# Allegro board xm655_board_file.brd
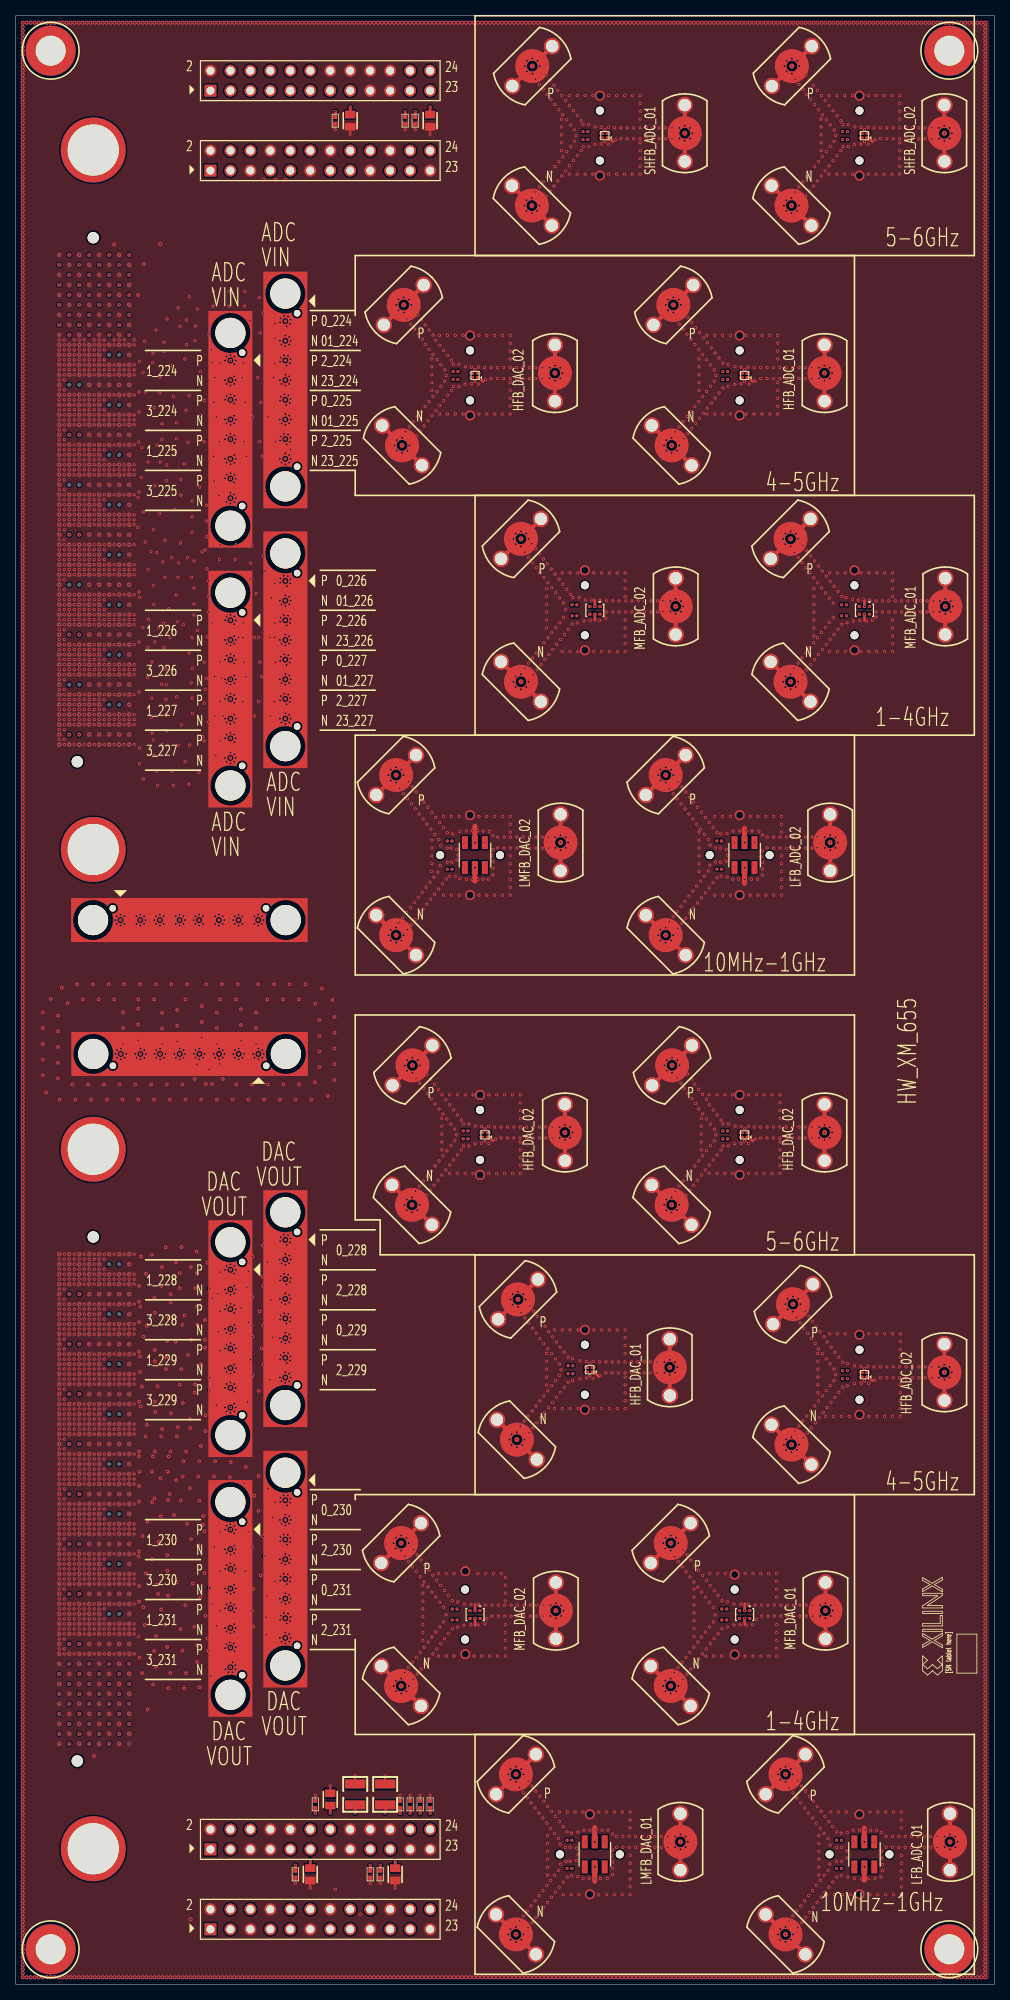
[diagram p0: board, top side]
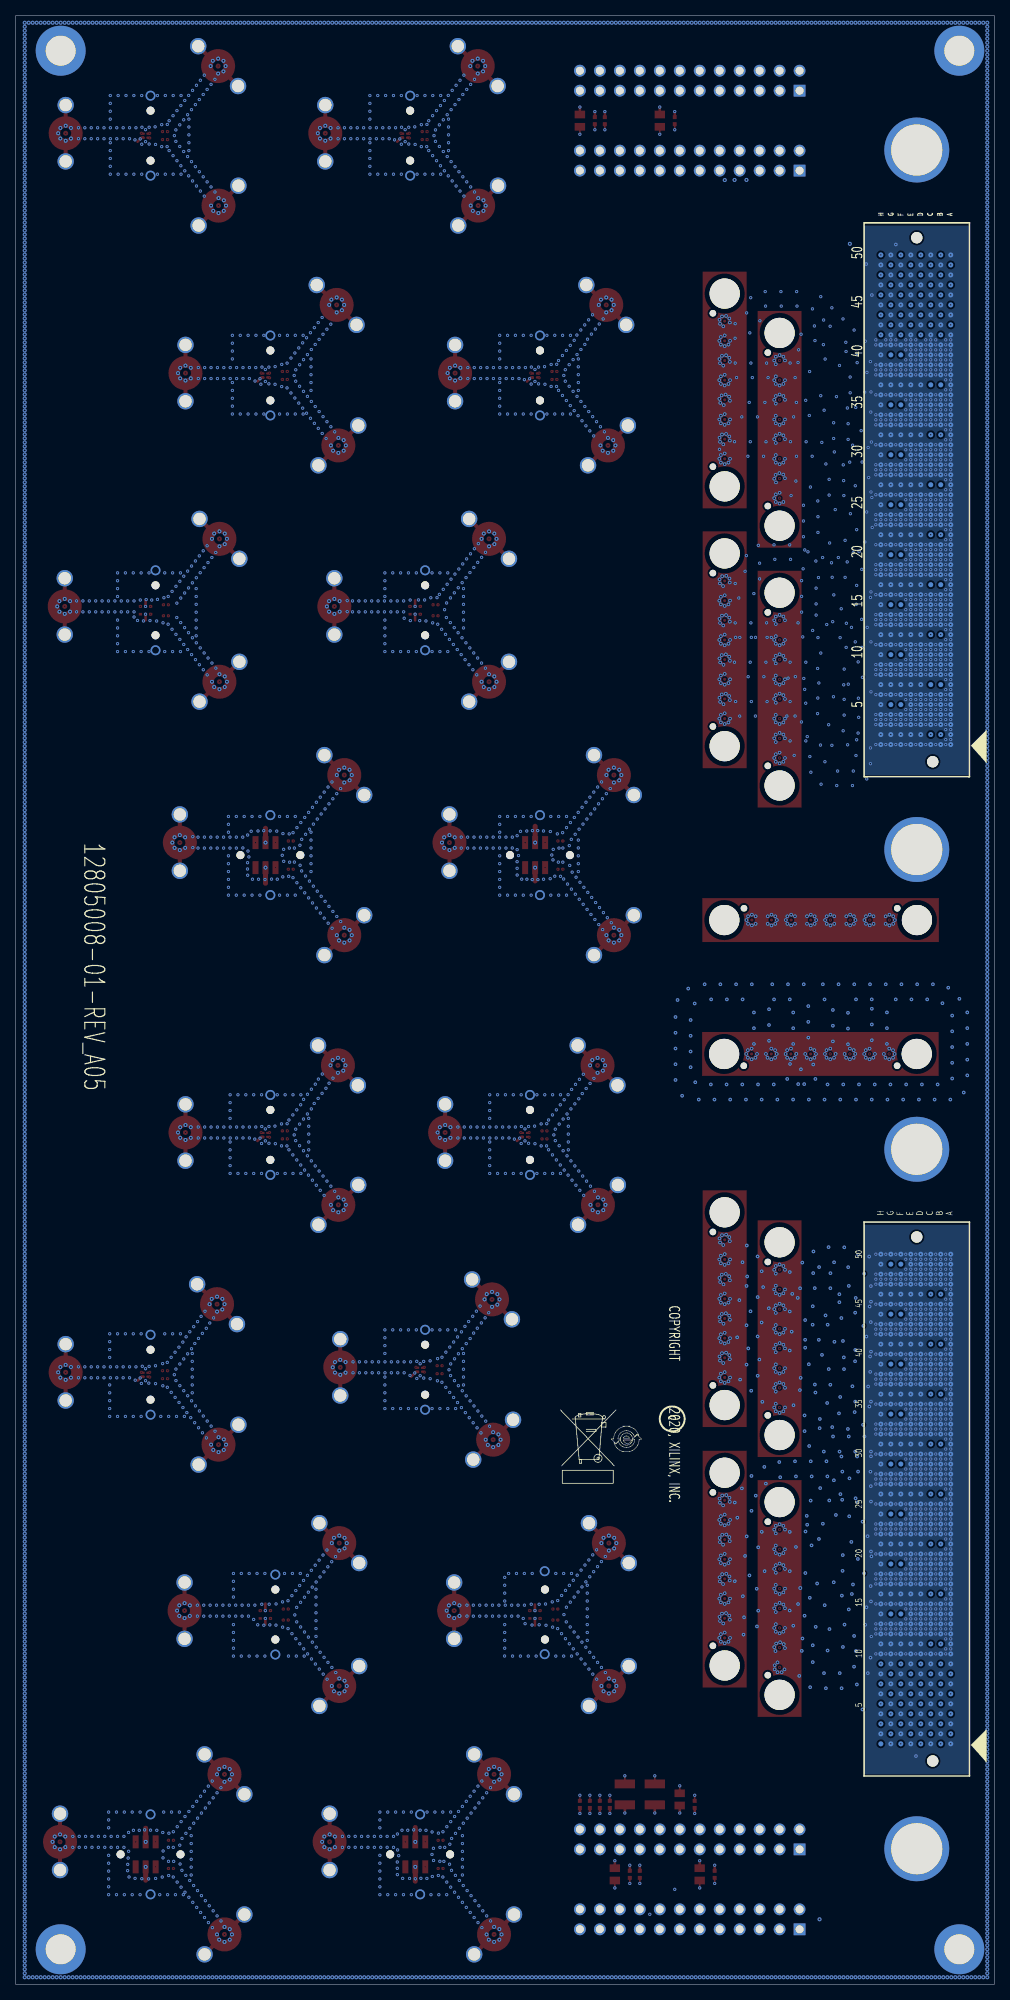
[diagram p1: board, bottom side, seen from below]

Outline 124.46 x 250.19 mm; copper layers: TOP, L02_RF_SIG, L03_GND, L04_RF_SIG, L05_GND, L06_PWR, L07_GND, L08_SIG, L09_GND, BOTTOM. Coordinates in mm from the lower left corner of the outline.
Outline path: 0,250.19 0,0 124.46,0 124.46,250.19 0,250.19

## Design rules (mm)
constraint set DEFAULT: min track width 0.318
net group EAST_TC_LAYER2_6INCH_: nets EAST_TC_LAYER2_6INCH_N EAST_TC_LAYER2_6INCH_P
net group EAST_TC_LAYER4_6INCH_: nets EAST_TC_LAYER4_6INCH_N EAST_TC_LAYER4_6INCH_P
net group HFB_ADC_01: nets HFB_ADC_01_N HFB_ADC_01_P
net group HFB_DAC_02: nets HFB_ADC_02_N HFB_ADC_02_P
net group HFB_DAC_02_P: nets HFB_DAC_02_P N22561101
net group LFB_ADC_01: nets LFB_ADC_01_N LFB_ADC_01_P
net group LFB_ADC_02: nets LFB_ADC_02_N LFB_ADC_02_P
net group LFB_DAC_01_P: nets LFB_DAC_01_P N22112826
net group LFB_DAC_02_N: nets LFB_DAC_02_N N22565166
net group LFB_DAC_02_P: nets LFB_DAC_02_P N22565110
net group MFB_ADC_01_P: nets MFB_ADC_01_P N21418030
net group MFB_ADC_02_N: nets MFB_ADC_02_N N21418070
net group MFB_ADC_02_P: nets MFB_ADC_02_P N21418063
net group MFB_DAC_01: nets MFB_DAC_01_N MFB_DAC_01_P
net group MFB_DAC_02: nets MFB_DAC_02_N MFB_DAC_02_P
net group TC_LAYER2_6INCH_: nets WEST_TC_LAYER2_6INCH_N WEST_TC_LAYER2_6INCH_P
net group TC_LAYER4_6INCH_: nets WEST_TC_LAYER4_6INCH_N WEST_TC_LAYER4_6INCH_P
net group ADC: nets ADC224_T0_CH0_P ADC224_T0_CH1_P ADC224_T0_CH2_P ADC224_T0_CH3_P ADC225_T1_CH0_P ADC225_T1_CH1_P ADC225_T1_CH2_P ADC225_T1_CH3_P ADC226_T2_CH0_P ADC226_T2_CH1_P ADC226_T2_CH2_P ADC226_T2_CH3_P ADC227_T3_CH0_P ADC227_T3_CH1_P ADC227_T3_CH2_P ADC227_T3_CH3_P
net group ADC_DATA: nets ADC224_T0_CH0_N ADC224_T0_CH1_N ADC224_T0_CH2_N ADC224_T0_CH3_N ADC225_T1_CH0_N ADC225_T1_CH1_N ADC225_T1_CH2_N ADC225_T1_CH3_N ADC226_T2_CH0_N ADC226_T2_CH1_N ADC226_T2_CH2_N ADC226_T2_CH3_N ADC227_T3_CH0_N ADC227_T3_CH1_N ADC227_T3_CH2_N ADC227_T3_CH3_N
net group ADC_DIG: nets ADCIO_00 ADCIO_01 ADCIO_02 ADCIO_03 ADCIO_04 ADCIO_05 ADCIO_06 ADCIO_07 ADCIO_08 ADCIO_09 ADCIO_10 ADCIO_11 ADCIO_12 ADCIO_13 ADCIO_14 ADCIO_15 ADCIO_16 ADCIO_17 ADCIO_18 ADCIO_19
net group DAC: nets DAC228_T0_CH0_P DAC228_T0_CH1_P DAC228_T0_CH2_P DAC228_T0_CH3_P DAC229_T1_CH0_P DAC229_T1_CH1_P DAC229_T1_CH2_P DAC229_T1_CH3_P DAC230_T2_CH0_P DAC230_T2_CH1_P DAC230_T2_CH2_P DAC230_T2_CH3_P DAC231_T3_CH0_P DAC231_T3_CH1_P DAC231_T3_CH2_P DAC231_T3_CH3_P
net group DAC_DATA: nets DAC228_T0_CH0_N DAC228_T0_CH1_N DAC228_T0_CH2_N DAC228_T0_CH3_N DAC229_T1_CH0_N DAC229_T1_CH1_N DAC229_T1_CH2_N DAC229_T1_CH3_N DAC230_T2_CH0_N DAC230_T2_CH1_N DAC230_T2_CH2_N DAC230_T2_CH3_N DAC231_T3_CH0_N DAC231_T3_CH1_N DAC231_T3_CH2_N DAC231_T3_CH3_N
net group DAC_DIG: nets DACIO_00 DACIO_01 DACIO_02 DACIO_03 DACIO_04 DACIO_05 DACIO_06 DACIO_07 DACIO_08 DACIO_09 DACIO_10 DACIO_11 DACIO_12 DACIO_13 DACIO_14 DACIO_15 DACIO_16 DACIO_17 DACIO_18 DACIO_19
net group HFB_ADC_02: nets HFB_DAC_02_N
net group LFB_DAC_01: nets LFB_DAC_01_N
net group MFB_ADC_01: nets MFB_ADC_01_N

## Placement (name value [footprint] x y rotation side)
C1  0.1UF  [CAPC60X30X40]  105.36 175.32 180 top
C2  0.1UF  [CAPC60X30X40]  90.23 204.98 180 top
C3  0.1UF  [CAPC60X30X40]  105.36 173.93 180 top
C4  0.1UF  [CAPC60X30X40]  90.23 203.96 180 top
C5  0.1UF  [CAPC60X30X40]  71.07 175.32 180 top
C6  0.1UF  [CAPC60X30X40]  105.47 77.98 180 top
C7  0.1UF  [CAPC60X30X40]  71.07 173.93 180 top
C8  0.1UF  [CAPC60X30X40]  105.47 76.96 180 top
C9  0.1UF  [CAPC60X30X40]  104.72 14.72 180 top
C10  0.1UF  [CAPC60X30X40]  104.72 18.3 180 top
C11  0.1UF  [CAPC60X30X40]  89.48 141.72 180 top
C12  0.1UF  [CAPC60X30X40]  89.48 145.3 180 top
C13  0.1UF  [CAPC60X30X40]  90.12 47.69 180 top
C14  0.1UF  [CAPC60X30X40]  70.55 78.61 180 top
C15  0.1UF  [CAPC60X30X40]  90.12 46.29 180 top
C16  0.1UF  [CAPC60X30X40]  70.55 77.6 180 top
C17  0.1UF  [CAPC60X30X40]  55.83 47.69 180 top
C18  0.1UF  [CAPC60X30X40]  55.94 204.98 180 top
C19  0.1UF  [CAPC60X30X40]  55.83 46.29 180 top
C20  0.1UF  [CAPC60X30X40]  55.94 203.96 180 top
C21  0.1UF  [CAPC60X30X40]  70.43 14.72 180 top
C22  0.1UF  [CAPC60X30X40]  70.43 18.3 180 top
C23  0.1UF  [CAPC60X30X40]  55.19 141.72 180 top
C24  0.1UF  [CAPC60X30X40]  55.19 145.3 180 top
C25  10UF  [CAPC320X250X220]  43.18 24.13 90 top
C26  1UF  [CAPC100X50X60]  51.44 22.86 90 top
C27  1UF  [CAPC100X50X60]  50.16 22.86 90 top
C29  10UF  [CAPC200X125X155]  52.7 236.85 270 top
C30  1UF  [CAPC100X50X60]  50.8 236.85 270 top
C31  1UF  [CAPC100X50X60]  49.53 236.85 270 top
C32  10UF  [CAPC200X125X155]  42.55 236.85 270 top
C33  1UF  [CAPC100X50X60]  40.64 236.85 270 top
C34  10UF  [CAPC200X125X155]  37.47 13.97 270 top
C35  1UF  [CAPC100X50X60]  35.56 13.97 270 top
C36  10UF  [CAPC320X250X220]  46.99 24.13 90 top
C37  1UF  [CAPC100X50X60]  52.7 22.86 90 top
C38  1UF  [CAPC100X50X60]  48.9 22.86 90 top
C39  10UF  [CAPC200X125X155]  48.26 13.97 270 top
C40  1UF  [CAPC100X50X60]  46.35 13.97 270 top
C41  1UF  [CAPC100X50X60]  45.09 13.97 270 top
C42  10UF  [CAPC200X125X155]  40.01 23.5 90 top
C43  1UF  [CAPC100X50X60]  38.1 22.86 90 top
C44  0.1UF  [CAPC60X30X40]  72.45 235.46 180 top
C45  0.1UF  [CAPC60X30X40]  72.45 234.44 180 top
C46  0.1UF  [CAPC60X30X40]  105.47 235.46 180 top
C47  0.1UF  [CAPC60X30X40]  105.47 234.44 180 top
C48  0.1UF  [CAPC60X30X40]  90.23 108.46 180 top
C49  0.1UF  [CAPC60X30X40]  90.23 107.44 180 top
C50  0.1UF  [CAPC60X30X40]  57.21 108.46 180 top
C51  0.1UF  [CAPC60X30X40]  57.21 107.44 180 top
J1  CON_SMA_SCREW_ON  [SMA_3P_MOLEX_732513481]  98.55 183.71 135 top
J2  CON_SMA_SCREW_ON  [SMA_3P_MOLEX_732513481]  83.64 213.44 135 top
J3  CON_SMA_SCREW_ON  [SMA_3P_MOLEX_732513481]  118.23 175.12 0 top
J4  CON_SMA_SCREW_ON  [SMA_3P_MOLEX_732513481]  102.87 204.77 0 top
J5  CON_SMA_SCREW_ON  [SMA_3P_MOLEX_732513481]  98.55 165.54 45 top
J6  CON_SMA_SCREW_ON  [SMA_3P_MOLEX_732513481]  83.43 195.58 45 top
J7  CON_SMA_SCREW_ON  [SMA_3P_MOLEX_732513481]  83.94 175.12 0 top
J8  CON_SMA_SCREW_ON  [SMA_3P_MOLEX_732513481]  64.26 183.71 135 top
J9  CON_SMA_SCREW_ON  [SMA_3P_MOLEX_732513481]  118.11 77.77 0 top
J10  CON_SMA_SCREW_ON  [SMA_3P_MOLEX_732513481]  98.86 86.44 135 top
J11  CON_SMA_SCREW_ON  [SMA_3P_MOLEX_732513481]  64.26 165.54 45 top
J12  CON_SMA_SCREW_ON  [SMA_3P_MOLEX_732513481]  98.67 68.58 45 top
J13  CON_SMA_SCREW_ON  [SMA_3P_MOLEX_732513481]  118.83 18.1 0 top
J14  CON_SMA_SCREW_ON  [SMA_3P_MOLEX_732513481]  97.91 6.33 45 top
J15  CON_SMA_SCREW_ON  [SMA_3P_MOLEX_732513481]  97.91 26.69 135 top
J16  CON_SMA_SCREW_ON  [SMA_3P_MOLEX_732513481]  82.67 133.33 45 top
J17  CON_SMA_SCREW_ON  [SMA_3P_MOLEX_732513481]  103.59 145.1 0 top
J18  CON_SMA_SCREW_ON  [SMA_3P_MOLEX_732513481]  82.67 153.69 135 top
J21  -  [HDR_2X12]  24.77 230.5 0 top
J23  -  [HDR_2X12]  24.77 240.66 0 top
J25  CON_SMA_SCREW_ON  [SMA_3P_MOLEX_732513481]  102.99 47.48 0 top
J26  CON_SMA_SCREW_ON  [SMA_3P_MOLEX_732513481]  83.31 56.07 135 top
J27  CON_SMA_SCREW_ON  [SMA_3P_MOLEX_732513481]  83.19 78.41 0 top
J28  CON_SMA_SCREW_ON  [SMA_3P_MOLEX_732513481]  63.88 87.05 135 top
J29  CON_SMA_SCREW_ON  [SMA_3P_MOLEX_732513481]  83.31 37.91 45 top
J30  CON_SMA_SCREW_ON  [SMA_3P_MOLEX_732513481]  63.74 69.22 45 top
J31  CON_SMA_SCREW_ON  [SMA_3P_MOLEX_732513481]  49.02 56.07 135 top
J32  CON_SMA_SCREW_ON  [SMA_3P_MOLEX_732513481]  49.35 213.44 135 top
J33  CON_SMA_SCREW_ON  [SMA_3P_MOLEX_732513481]  68.7 47.48 0 top
J34  CON_SMA_SCREW_ON  [SMA_3P_MOLEX_732513481]  68.58 204.77 0 top
J35  CON_SMA_SCREW_ON  [SMA_3P_MOLEX_732513481]  49.02 37.91 45 top
J36  CON_SMA_SCREW_ON  [SMA_3P_MOLEX_732513481]  49.14 195.58 45 top
J37  CON_SMA_SCREW_ON  [SMA_3P_MOLEX_732513481]  63.62 6.33 45 top
J38  CON_SMA_SCREW_ON  [SMA_3P_MOLEX_732513481]  84.54 18.1 0 top
J39  CON_SMA_SCREW_ON  [SMA_3P_MOLEX_732513481]  63.62 26.69 135 top
J40  CON_SMA_SCREW_ON  [SMA_3P_MOLEX_732513481]  69.3 145.1 0 top
J41  CON_SMA_SCREW_ON  [SMA_3P_MOLEX_732513481]  48.38 133.33 45 top
J42  CON_SMA_SCREW_ON  [SMA_3P_MOLEX_732513481]  48.38 153.69 135 top
J44  -  [HDR_2X12]  24.77 6.99 0 top
J48  -  [HDR_2X12]  24.77 17.14 0 top
J49  -  [SAMTEC_LPAM_50_030_L_08_2_K_TR]  9.86 188.67 90 bottom
J50  -  [JSO_0415_01_PRESS_FIT]  9.86 144.22 0 top
J51  -  [JSO_0415_01_PRESS_FIT]  9.86 233.12 0 top
J52  -  [JSO_0415_01_PRESS_FIT]  9.86 17.22 0 top
J53  -  [JSO_0415_01_PRESS_FIT]  9.86 106.12 0 top
J55  -  [SAMTEC_LPAM_50_030_L_08_2_K_TR]  9.86 61.67 90 bottom
J56  COREHC2_8CH  [CON_CARLISE_COREH2C_8P]  30.86 118.24 180 top
J57  COREHC2_8CH  [CON_CARLISE_COREH2C_8P]  13.34 135.25 0 top
J58  CON_SMA_SCREW_ON  [SMA_3P_MOLEX_732513481]  65.7 243.79 135 top
J59  CON_SMA_SCREW_ON  [SMA_3P_MOLEX_732513481]  85.09 235.25 0 top
J60  CON_SMA_SCREW_ON  [SMA_3P_MOLEX_732513481]  65.65 226.06 45 top
J61  CON_SMA_SCREW_ON  [SMA_3P_MOLEX_732513481]  98.72 243.79 135 top
J62  CON_SMA_SCREW_ON  [SMA_3P_MOLEX_732513481]  118.11 235.25 0 top
J63  CON_SMA_SCREW_ON  [SMA_3P_MOLEX_732513481]  98.67 226.06 45 top
J64  CON_SMA_SCREW_ON  [SMA_3P_MOLEX_732513481]  83.48 116.79 135 top
J65  CON_SMA_SCREW_ON  [SMA_3P_MOLEX_732513481]  102.87 108.25 0 top
J66  CON_SMA_SCREW_ON  [SMA_3P_MOLEX_732513481]  83.43 99.06 45 top
J67  CON_SMA_SCREW_ON  [SMA_3P_MOLEX_732513481]  50.46 116.79 135 top
J68  CON_SMA_SCREW_ON  [SMA_3P_MOLEX_732513481]  69.85 108.25 0 top
J69  CON_SMA_SCREW_ON  [SMA_3P_MOLEX_732513481]  50.41 99.06 45 top
JHC1  COREHC2_8CH  [CON_CARLISE_COREH2C_8P]  34.29 94.61 270 top
JHC2  COREHC2_8CH  [CON_CARLISE_COREH2C_8P]  27.3 90.81 270 top
JHC3  COREHC2_8CH  [CON_CARLISE_COREH2C_8P]  34.29 61.52 270 top
JHC4  COREHC2_8CH  [CON_CARLISE_COREH2C_8P]  27.3 57.78 270 top
JHC5  COREHC2_8CH  [CON_CARLISE_COREH2C_8P]  34.29 211.38 270 top
JHC6  COREHC2_8CH  [CON_CARLISE_COREH2C_8P]  27.3 206.38 270 top
JHC7  COREHC2_8CH  [CON_CARLISE_COREH2C_8P]  34.29 178.36 270 top
JHC8  COREHC2_8CH  [CON_CARLISE_COREH2C_8P]  27.3 173.35 270 top
MH1  MH_150_250  [MH_250H150]  4.45 245.75 0 top
MH2  MH_150_250  [MH_250H150]  118.75 245.75 0 top
MH3  MH_150_250  [MH_250H150]  118.75 4.45 0 top
MH4  MH_150_250  [MH_250H150]  4.45 4.45 0 top
NOREF  -  [unnamed]  107.31 231.78 0 top
NOREF#2  -  [unnamed]  92.08 207.65 0 top
NOREF#3  -  [#2]  -2.03 433.7 0 top
NOREF#4  -  [#2]  195.03 469.76 0 top
NOREF#5  -  [unnamed]  91.44 50.16 0 top
NOREF#6  -  [unnamed]  69.22 16.51 0 top
NOREF#7  -  [unnamed]  72.39 177.8 0 top
NOREF#8  -  [#2]  -1.93 17.14 0 top
NOREF#9  -  [unnamed]  59.05 104.78 0 top
NOREF#10  -  [#2]  21.1 253.37 0 top
NOREF#11  -  [#2]  13.93 413.64 0 top
NOREF#12  -  [#2]  124.46 0 90 top
NOREF#13  -  [unnamed]  74.3 238.12 0 top
NOREF#14  -  [unnamed]  106.68 177.8 0 top
NOREF#15  -  [unnamed]  72.39 171.45 0 top
NOREF#16  -  [unnamed]  76.83 16.51 0 top
NOREF#17  -  [#2]  23.5 149.22 0 top
NOREF#18  -  [#2]  24.23 100.97 0 top
NOREF#19  -  [unnamed]  107.31 74.3 0 top
NOREF#20  -  [unnamed]  111.12 16.51 0 top
NOREF#21  -  [unnamed]  103.5 16.51 0 top
NOREF#22  -  [unnamed]  57.78 207.65 0 top
NOREF#23  -  [unnamed]  59.05 111.12 0 top
NOREF#24  -  [unnamed]  57.78 201.29 0 top
NOREF#25  -  [unnamed]  92.08 104.78 0 top
NOREF#26  -  [unnamed]  95.89 143.51 0 top
NOREF#27  -  [unnamed]  88.27 143.51 0 top
NOREF#28  -  [unnamed]  91.44 43.81 0 top
NOREF#29  -  [unnamed]  72.39 74.93 0 top
NOREF#30  -  [#2]  5.39 181.74 0 top
NOREF#31  -  [unnamed]  53.98 143.51 0 top
NOREF#32  -  [unnamed]  74.3 231.78 0 top
NOREF#33  -  [unnamed]  92.08 201.29 0 top
NOREF#34  -  [unnamed]  57.15 43.81 0 top
NOREF#35  -  [unnamed]  57.15 50.16 0 top
NOREF#36  -  [unnamed]  92.08 111.12 0 top
NOREF#37  -  [#2]  0 250.19 0 top
NOREF#38  -  [#2]  5.71 126.66 0 top
NOREF#39  -  [unnamed]  61.59 143.51 0 top
NOREF#40  -  [unnamed]  107.31 238.12 0 top
NOREF#41  -  [#2]  195.25 -18.37 0 top
NOREF#42  -  [unnamed]  106.68 171.45 0 top
NOREF#43  -  [#2]  -2.03 -9.25 0 top
NOREF#44  -  [unnamed]  107.31 80.64 0 top
NOREF#45  -  [#2]  -2.03 464.02 0 top
NOREF#46  -  [unnamed]  72.39 81.28 0 top
NOREF#47  -  [#2]  655.72 288.7 0 top
U1  BD1631J50100AHF  [BALUN_0805]  107.95 174.62 270 top
U2  -  [BD3150N50100AHF]  92.71 204.47 270 top
U3  BD1631J50100AHF  [BALUN_0805]  73.66 174.62 270 top
U4  -  [BD3150N50100AHF]  107.95 77.47 270 top
U5  TCM2-33WX+  [TRANS_DB1627]  107.95 16.51 180 top
U6  TCM2-33WX+  [TRANS_DB1627]  92.71 143.51 180 top
U7  BD1631J50100AHF  [BALUN_0805]  92.71 46.99 270 top
U8  -  [BD3150N50100AHF]  73.03 78.11 270 top
U9  BD1631J50100AHF  [BALUN_0805]  58.42 46.99 270 top
U10  -  [BD3150N50100AHF]  58.42 204.47 270 top
U11  TCM2-33WX+  [TRANS_DB1627]  73.66 16.51 180 top
U12  TCM2-33WX+  [TRANS_DB1627]  58.42 143.51 180 top
U13  BD4859N50100AHF  [BD3150N50100AHF]  74.93 234.95 270 top
U14  BD4859N50100AHF  [BD3150N50100AHF]  107.95 234.95 270 top
U15  BD4859N50100AHF  [BD3150N50100AHF]  92.71 107.95 270 top
U16  BD4859N50100AHF  [BD3150N50100AHF]  59.69 107.95 270 top

## Library data of the parts
C1 C21 C23 C24 = CAP_NP: alternate symbols: (CAPC60X30X40RND); signal model: DEFAULT_CAPACITOR_100000pF_2_1
C2-C4 C8-C20 C22 C44-C51 = CAP_NP: alternate symbols: (CAPC60X30X40RND)
C5 = CAP_NP: alternate symbols: (CAPC60X30X40RND); signal model: DEFAULT_CAPACITOR_2.2e+07pF_2_1
C6 = CAP_NP: alternate symbols: (CAPC60X30X40RND); signal model: DEFAULT_CAPACITOR_1e+08pF_2_1
C7 = CAP_NP: alternate symbols: (CAPC60X30X40RND); signal model: DEFAULT_CAPACITOR_1e+07pF_2_1
C25 = CAP_NP: alternate symbols: (CAPC320X250X220RND); signal model: CAP_NP_CAPC60X30X40_0.1UF_CAPC60X30X40RND_0.1UF
C26 C27 C31 C37 C40 = CAP_NP: alternate symbols: (CAPC100X50X60RND); signal model: DEFAULT_CAPACITOR_100000pF_2_1
C29 C32 C34 C39 = CAP_NP: alternate symbols: (CAPC200X125X155RND)
C30 C33 C35 C38 = CAP_NP: alternate symbols: (CAPC100X50X60RND)
C36 = CAP_NP: alternate symbols: (CAPC320X250X220RND)
C41 = CAP_NP: alternate symbols: (CAPC100X50X60RND); signal model: DEFAULT_CAPACITOR_1e+06pF_2_1
C42 = CAP_NP: alternate symbols: (CAPC200X125X155RND); signal model: DEFAULT_CAPACITOR_100000pF_2_1
C43 = CAP_NP: alternate symbols: (CAPC100X50X60RND); signal model: DEFAULT_CAPACITOR_1000pF_2_1
J1-J18 J25-J42 J58-J69 = SMA-SCREW-ON: alternate symbols: (32K10K_400_3M_73251_DUAL)
J21 J23 J44 J48 = HDR_2X12
J49 J55 = LPAM-50-01.0-L-08-2-K-TR
J50-J53 = HOLE_JSO
J56 J57 JHC1-JHC8 = COREHC2_8CH
MH1-MH4 = HOLE
U1 U3 U7 U9 = BD1631J50100AHF
U2 U4 U8 U10 = BD3150N50100AHF
U5 U6 U11 U12 = TCM2-33WX+
U13-U16 = BD4859N50100AHF

## Footprints (pads in the part's own frame, mm; a bottom-side part is the same pattern mirrored in y, then rotated)
BALUN_0805
  rect 0.33x0.406 smd: 1(-0.495,0.65) 2(-0.495,0) 3(-0.495,-0.65) 4(0.495,-0.65) 5(0.495,0) 6(0.495,0.65)
BD3150N50100AHF
  rect 0.3x0.3 smd: 1(0.28,0.28)
  rect 0.25x0.25 smd: 2(-0.25,0.25) 3(-0.25,-0.25) 4(0.25,-0.25)
CAPC60X30X40
  rect 0.275x0.33 smd: 1(-0.263,0) 2(0.263,0)
CAPC100X50X60
  rect 0.5x0.51 smd: 1(-0.45,0) 2(0.45,0)
CAPC200X125X155
  rect 0.98x1.32 smd: 1(-0.78,0) 2(0.78,0)
CAPC320X250X220
  rect 1.145x2.59 smd: 1(-1.333,0) 2(1.333,0)
CON_CARLISE_COREH2C_8P
  round 3.835 hole 3.835 unplated: (-3.5,0) (21,0)
  round 0.838 hole 0.838 unplated: (-1,1.5) (18.5,1.5)
  round 0.406 smd: 1(0,0) 2(2.5,0) 3(5,0) 4(7.5,0) 5(10,0) 6(12.5,0) 7(15,0) 8(17.5,0)
  round 0.1 smd: 9(1.25,1.25) 10(16.25,1.25)
HDR_2X12
  rect 1.5x1.5 hole 1.016: 1(0,0)
  round 1.5 hole 1.016: 2(0,2.54) 3(2.54,0) 4(2.54,2.54) 5(5.08,0) 6(5.08,2.54) 7(7.62,0) 8(7.62,2.54) 9(10.16,0) 10(10.16,2.54) 11(12.7,0) 12(12.7,2.54) 13(15.24,0) 14(15.24,2.54) 15(17.78,0) 16(17.78,2.54) 17(20.32,0) 18(20.32,2.54) 19(22.86,0) 20(22.86,2.54) 21(25.4,0) 22(25.4,2.54) 23(27.94,0) 24(27.94,2.54)
JSO_0415_01_PRESS_FIT
  round 8.255 hole 6.502 unplated: (0,0)
MH_250H150
  round 6.35 hole 3.81: 1(0,0)
SAMTEC_LPAM_50_030_L_08_2_K_TR
  round 1.44 hole 1.448 unplated: (-33.295,-2.03) (33.305,0)
  round 0.64 smd: A1(-31.115,-4.32) A2(-29.845,-4.32) A3(-28.575,-4.32) A4(-27.305,-4.32) A5(-26.035,-4.32) A6(-24.765,-4.32) A7(-23.495,-4.32) A8(-22.225,-4.32) A9(-20.955,-4.32) A10(-19.685,-4.32) A11(-18.415,-4.32) A12(-17.145,-4.32) A13(-15.875,-4.32) A14(-14.605,-4.32) A15(-13.335,-4.32) A16(-12.065,-4.32) A17(-10.795,-4.32) A18(-9.525,-4.32) A19(-8.255,-4.32) A20(-6.985,-4.32) A21(-5.715,-4.32) A22(-4.445,-4.32) A23(-3.175,-4.32) A24(-1.905,-4.32) A25(-0.635,-4.32) A26(0.635,-4.32) A27(1.905,-4.32) A28(3.175,-4.32) A29(4.445,-4.32) A30(5.715,-4.32) A31(6.985,-4.32) A32(8.255,-4.32) A33(9.525,-4.32) A34(10.795,-4.32) A35(12.065,-4.32) A36(13.335,-4.32) A37(14.605,-4.32) A38(15.875,-4.32) A39(17.145,-4.32) A40(18.415,-4.32) A41(19.685,-4.32) A42(20.955,-4.32) A43(22.225,-4.32) A44(23.495,-4.32) A45(24.765,-4.32) A46(26.035,-4.32) A47(27.305,-4.32) A48(28.575,-4.32) A49(29.845,-4.32) A50(31.115,-4.32) B1(-31.115,-3.05) B2(-29.845,-3.05) B3(-28.575,-3.05) B4(-27.305,-3.05) B5(-26.035,-3.05) B6(-24.765,-3.05) B7(-23.495,-3.05) B8(-22.225,-3.05) B9(-20.955,-3.05) B10(-19.685,-3.05) B11(-18.415,-3.05) B12(-17.145,-3.05) B13(-15.875,-3.05) B14(-14.605,-3.05) B15(-13.335,-3.05) B16(-12.065,-3.05) B17(-10.795,-3.05) B18(-9.525,-3.05) B19(-8.255,-3.05) B20(-6.985,-3.05) B21(-5.715,-3.05) B22(-4.445,-3.05) B23(-3.175,-3.05) B24(-1.905,-3.05) B25(-0.635,-3.05) B26(0.635,-3.05) B27(1.905,-3.05) B28(3.175,-3.05) B29(4.445,-3.05) B30(5.715,-3.05) B31(6.985,-3.05) B32(8.255,-3.05) B33(9.525,-3.05) B34(10.795,-3.05) B35(12.065,-3.05) B36(13.335,-3.05) B37(14.605,-3.05) B38(15.875,-3.05) B39(17.145,-3.05) B40(18.415,-3.05) B41(19.685,-3.05) B42(20.955,-3.05) B43(22.225,-3.05) B44(23.495,-3.05) B45(24.765,-3.05) B46(26.035,-3.05) B47(27.305,-3.05) B48(28.575,-3.05) B49(29.845,-3.05) B50(31.115,-3.05) C1(-31.115,-1.78) C2(-29.845,-1.78) C3(-28.575,-1.78) C4(-27.305,-1.78) C5(-26.035,-1.78) C6(-24.765,-1.78) C7(-23.495,-1.78) C8(-22.225,-1.78) C9(-20.955,-1.78) C10(-19.685,-1.78) C11(-18.415,-1.78) C12(-17.145,-1.78) C13(-15.875,-1.78) C14(-14.605,-1.78) C15(-13.335,-1.78) C16(-12.065,-1.78) C17(-10.795,-1.78) C18(-9.525,-1.78) C19(-8.255,-1.78) C20(-6.985,-1.78) C21(-5.715,-1.78) C22(-4.445,-1.78) C23(-3.175,-1.78) C24(-1.905,-1.78) C25(-0.635,-1.78) C26(0.635,-1.78) C27(1.905,-1.78) C28(3.175,-1.78) C29(4.445,-1.78) C30(5.715,-1.78) C31(6.985,-1.78) C32(8.255,-1.78) C33(9.525,-1.78) C34(10.795,-1.78) C35(12.065,-1.78) C36(13.335,-1.78) C37(14.605,-1.78) C38(15.875,-1.78) C39(17.145,-1.78) C40(18.415,-1.78) C41(19.685,-1.78) C42(20.955,-1.78) C43(22.225,-1.78) C44(23.495,-1.78) C45(24.765,-1.78) C46(26.035,-1.78) C47(27.305,-1.78) C48(28.575,-1.78) C49(29.845,-1.78) C50(31.115,-1.78) D1(-31.115,-0.51) D2(-29.845,-0.51) D3(-28.575,-0.51) D4(-27.305,-0.51) D5(-26.035,-0.51) D6(-24.765,-0.51) D7(-23.495,-0.51) D8(-22.225,-0.51) D9(-20.955,-0.51) D10(-19.685,-0.51) D11(-18.415,-0.51) D12(-17.145,-0.51) D13(-15.875,-0.51) D14(-14.605,-0.51) D15(-13.335,-0.51) D16(-12.065,-0.51) D17(-10.795,-0.51) D18(-9.525,-0.51) D19(-8.255,-0.51) D20(-6.985,-0.51) D21(-5.715,-0.51) D22(-4.445,-0.51) D23(-3.175,-0.51) D24(-1.905,-0.51) D25(-0.635,-0.51) D26(0.635,-0.51) D27(1.905,-0.51) D28(3.175,-0.51) D29(4.445,-0.51) D30(5.715,-0.51) D31(6.985,-0.51) D32(8.255,-0.51) D33(9.525,-0.51) D34(10.795,-0.51) D35(12.065,-0.51) D36(13.335,-0.51) D37(14.605,-0.51) D38(15.875,-0.51) D39(17.145,-0.51) D40(18.415,-0.51) D41(19.685,-0.51) D42(20.955,-0.51) D43(22.225,-0.51) D44(23.495,-0.51) D45(24.765,-0.51) D46(26.035,-0.51) D47(27.305,-0.51) D48(28.575,-0.51) D49(29.845,-0.51) D50(31.115,-0.51) E1(-31.115,0.76) E2(-29.845,0.76) E3(-28.575,0.76) E4(-27.305,0.76) E5(-26.035,0.76) E6(-24.765,0.76) E7(-23.495,0.76) E8(-22.225,0.76) E9(-20.955,0.76) E10(-19.685,0.76) E11(-18.415,0.76) E12(-17.145,0.76) E13(-15.875,0.76) E14(-14.605,0.76) E15(-13.335,0.76) E16(-12.065,0.76) E17(-10.795,0.76) E18(-9.525,0.76) E19(-8.255,0.76) E20(-6.985,0.76) E21(-5.715,0.76) E22(-4.445,0.76) E23(-3.175,0.76) E24(-1.905,0.76) E25(-0.635,0.76) E26(0.635,0.76) E27(1.905,0.76) E28(3.175,0.76) E29(4.445,0.76) E30(5.715,0.76) E31(6.985,0.76) E32(8.255,0.76) E33(9.525,0.76) E34(10.795,0.76) E35(12.065,0.76) E36(13.335,0.76) E37(14.605,0.76) E38(15.875,0.76) E39(17.145,0.76) E40(18.415,0.76) E41(19.685,0.76) E42(20.955,0.76) E43(22.225,0.76) E44(23.495,0.76) E45(24.765,0.76) E46(26.035,0.76) E47(27.305,0.76) E48(28.575,0.76) E49(29.845,0.76) E50(31.115,0.76) F1(-31.115,2.03) F2(-29.845,2.03) F3(-28.575,2.03) F4(-27.305,2.03) F5(-26.035,2.03) F6(-24.765,2.03) F7(-23.495,2.03) F8(-22.225,2.03) F9(-20.955,2.03) F10(-19.685,2.03) F11(-18.415,2.03) F12(-17.145,2.03) F13(-15.875,2.03) F14(-14.605,2.03) F15(-13.335,2.03) F16(-12.065,2.03) F17(-10.795,2.03) F18(-9.525,2.03) F19(-8.255,2.03) F20(-6.985,2.03) F21(-5.715,2.03) F22(-4.445,2.03) F23(-3.175,2.03) F24(-1.905,2.03) F25(-0.635,2.03) F26(0.635,2.03) F27(1.905,2.03) F28(3.175,2.03) F29(4.445,2.03) F30(5.715,2.03) F31(6.985,2.03) F32(8.255,2.03) F33(9.525,2.03) F34(10.795,2.03) F35(12.065,2.03) F36(13.335,2.03) F37(14.605,2.03) F38(15.875,2.03) F39(17.145,2.03) F40(18.415,2.03) F41(19.685,2.03) F42(20.955,2.03) F43(22.225,2.03) F44(23.495,2.03) F45(24.765,2.03) F46(26.035,2.03) F47(27.305,2.03) F48(28.575,2.03) F49(29.845,2.03) F50(31.115,2.03) G1(-31.115,3.3) G2(-29.845,3.3) G3(-28.575,3.3) G4(-27.305,3.3) G5(-26.035,3.3) G6(-24.765,3.3) G7(-23.495,3.3) G8(-22.225,3.3) G9(-20.955,3.3) G10(-19.685,3.3) G11(-18.415,3.3) G12(-17.145,3.3) G13(-15.875,3.3) G14(-14.605,3.3) G15(-13.335,3.3) G16(-12.065,3.3) G17(-10.795,3.3) G18(-9.525,3.3) G19(-8.255,3.3) G20(-6.985,3.3) G21(-5.715,3.3) G22(-4.445,3.3) G23(-3.175,3.3) G24(-1.905,3.3) G25(-0.635,3.3) G26(0.635,3.3) G27(1.905,3.3) G28(3.175,3.3) G29(4.445,3.3) G30(5.715,3.3) G31(6.985,3.3) G32(8.255,3.3) G33(9.525,3.3) G34(10.795,3.3) G35(12.065,3.3) G36(13.335,3.3) G37(14.605,3.3) G38(15.875,3.3) G39(17.145,3.3) G40(18.415,3.3) G41(19.685,3.3) G42(20.955,3.3) G43(22.225,3.3) G44(23.495,3.3) G45(24.765,3.3) G46(26.035,3.3) G47(27.305,3.3) G48(28.575,3.3) G49(29.845,3.3) G50(31.115,3.3) H1(-31.115,4.57) H2(-29.845,4.57) H3(-28.575,4.57) H4(-27.305,4.57) H5(-26.035,4.57) H6(-24.765,4.57) H7(-23.495,4.57) H8(-22.225,4.57) H9(-20.955,4.57) H10(-19.685,4.57) H11(-18.415,4.57) H12(-17.145,4.57) H13(-15.875,4.57) H14(-14.605,4.57) H15(-13.335,4.57) H16(-12.065,4.57) H17(-10.795,4.57) H18(-9.525,4.57) H19(-8.255,4.57) H20(-6.985,4.57) H21(-5.715,4.57) H22(-4.445,4.57) H23(-3.175,4.57) H24(-1.905,4.57) H25(-0.635,4.57) H26(0.635,4.57) H27(1.905,4.57) H28(3.175,4.57) H29(4.445,4.57) H30(5.715,4.57) H31(6.985,4.57) H32(8.255,4.57) H33(9.525,4.57) H34(10.795,4.57) H35(12.065,4.57) H36(13.335,4.57) H37(14.605,4.57) H38(15.875,4.57) H39(17.145,4.57) H40(18.415,4.57) H41(19.685,4.57) H42(20.955,4.57) H43(22.225,4.57) H44(23.495,4.57) H45(24.765,4.57) H46(26.035,4.57) H47(27.305,4.57) H48(28.575,4.57) H49(29.845,4.57) H50(31.115,4.57)
SMA_3P_MOLEX_732513481
  round 0.64 smd: 1(0,0)
  round 2.083 hole 1.575: 2(0,3.581) 3(0,-3.581)
TRANS_DB1627
  rect 0.76x1.65 smd: 1(-1.25,1.59) 2(0.02,1.59) 3(1.29,1.59) 4(1.29,-1.59) 5(0.02,-1.59) 6(-1.25,-1.59)
unnamed
  round 1.016 hole 1.016: 1(0,0)

## Nets
GND: C25.2 C26.2 C27.2 C29.2 C30.2 C31.2 C32.2 C33.2 C34.2 C35.2 C36.2 C37.2 C38.2 C39.2 C40.2 C41.2 C42.2 C43.2 J1.2 J1.3 J2.2 J2.3 J3.2 J3.3 J4.2 J4.3 J5.2 J5.3 J6.2 J6.3 J7.2 J7.3 J8.2 J8.3 J9.2 J9.3 J10.2 J10.3 J11.2 J11.3 J12.2 J12.3 J13.2 J13.3 J14.2 J14.3 J15.2 J15.3 J16.2 J16.3 J17.2 J17.3 J18.2 J18.3 J21.2 J21.5 J21.8 J21.11 J21.14 J21.17 J21.20 J21.23 J23.2 J23.14 J23.16 J23.17 J23.18 J23.19 J23.20 J25.2 J25.3 J26.2 J26.3 J27.2 J27.3 J28.2 J28.3 J29.2 J29.3 J30.2 J30.3 J31.2 J31.3 J32.2 J32.3 J33.2 J33.3 J34.2 J34.3 J35.2 J35.3 J36.2 J36.3 J37.2 J37.3 J38.2 J38.3 J39.2 J39.3 J40.2 J40.3 J41.2 J41.3 J42.2 J42.3 J44.2 J44.5 J44.8 J44.11 J44.14 J44.17 J44.20 J44.23 J48.2 J48.5 J48.7 J48.8 J48.10 J48.13 J48.15 J48.16 J48.18 J48.20 J48.21 J48.23 J49.A1 J49.A2 J49.A3 J49.A4 J49.A5 J49.A6 J49.A7 J49.A8 J49.A9 J49.A10 J49.A11 J49.A12 J49.A13 J49.A14 J49.A15 J49.A16 J49.A17 J49.A18 J49.A19 J49.A20 J49.A21 J49.A22 J49.A23 J49.A24 J49.A25 J49.A26 J49.A27 J49.A28 J49.A29 J49.A30 J49.A31 J49.A32 J49.A33 J49.A34 J49.A35 J49.A36 J49.A37 J49.A38 J49.A39 J49.A40 J49.A41 J49.A42 J49.A44 J49.A46 J49.A48 J49.A50 J49.B1 J49.B3 J49.B4 J49.B5 J49.B6 J49.B8 J49.B9 J49.B10 J49.B11 J49.B13 J49.B14 J49.B15 J49.B16 J49.B18 J49.B19 J49.B20 J49.B21 J49.B23 J49.B24 J49.B25 J49.B26 J49.B28 J49.B29 J49.B30 J49.B31 J49.B33 J49.B34 J49.B35 J49.B36 J49.B38 J49.B39 J49.B40 J49.B41 J49.B43 J49.B45 J49.B47 J49.B49 J49.C1 J49.C3 J49.C4 J49.C5 J49.C6 J49.C8 J49.C9 J49.C10 J49.C11 J49.C13 J49.C14 J49.C15 J49.C16 J49.C18 J49.C19 J49.C20 J49.C21 J49.C23 J49.C24 J49.C25 J49.C26 J49.C28 J49.C29 J49.C30 J49.C31 J49.C33 J49.C34 J49.C35 J49.C36 J49.C38 J49.C39 J49.C40 J49.C41 J49.C42 J49.C44 J49.C46 J49.C48 J49.C50 J49.D1 J49.D2 J49.D3 J49.D4 J49.D5 J49.D6 J49.D7 J49.D8 J49.D9 J49.D10 J49.D11 J49.D12 J49.D13 J49.D14 J49.D15 J49.D16 J49.D17 J49.D18 J49.D19 J49.D20 J49.D21 J49.D22 J49.D23 J49.D24 J49.D25 J49.D26 J49.D27 J49.D28 J49.D29 J49.D30 J49.D31 J49.D32 J49.D33 J49.D34 J49.D35 J49.D36 J49.D37 J49.D38 J49.D39 J49.D40 J49.D41 J49.D43 J49.D45 J49.D47 J49.D49 J49.E1 J49.E2 J49.E3 J49.E4 J49.E5 J49.E6 J49.E7 J49.E8 J49.E9 J49.E10 J49.E11 J49.E12 J49.E13 J49.E14 J49.E15 J49.E16 J49.E17 J49.E18 J49.E19 J49.E20 J49.E21 J49.E22 J49.E23 J49.E24 J49.E25 J49.E26 J49.E27 J49.E28 J49.E29 J49.E30 J49.E31 J49.E32 J49.E33 J49.E34 J49.E35 J49.E36 J49.E37 J49.E38 J49.E39 J49.E40 J49.E41 J49.E42 J49.E44 J49.E46 J49.E48 J49.E50 J49.F1 J49.F2 J49.F3 J49.F4 J49.F6 J49.F7 J49.F8 J49.F9 J49.F11 J49.F12 J49.F13 J49.F14 J49.F16 J49.F17 J49.F18 J49.F19 J49.F21 J49.F22 J49.F23 J49.F24 J49.F26 J49.F27 J49.F28 J49.F29 J49.F31 J49.F32 J49.F33 J49.F34 J49.F36 J49.F37 J49.F38 J49.F39 J49.F41 J49.F43 J49.F45 J49.F47 J49.F49 J49.G1 J49.G2 J49.G3 J49.G4 J49.G6 J49.G7 J49.G8 J49.G9 J49.G11 J49.G12 J49.G13 J49.G14 J49.G16 J49.G17 J49.G18 J49.G19 J49.G21 J49.G22 J49.G23 J49.G24 J49.G26 J49.G27 J49.G28 J49.G29 J49.G31 J49.G32 J49.G33 J49.G34 J49.G36 J49.G37 J49.G38 J49.G39 J49.G41 J49.G42 J49.G44 J49.G46 J49.G48 J49.G50 J49.H1 J49.H2 J49.H3 J49.H4 J49.H5 J49.H6 J49.H7 J49.H8 J49.H9(9) J49.H10 J49.H11 J49.H12 J49.H13 J49.H14 J49.H15 J49.H16 J49.H17 J49.H18 J49.H19 J49.H20 J49.H21 J49.H22 J49.H23 J49.H24 J49.H25 J49.H26 J49.H27 J49.H28 J49.H29 J49.H30 J49.H31 J49.H32 J49.H33 J49.H34 J49.H35 J49.H36 J49.H37 J49.H38 J49.H39 J49.H40 J49.H41 J49.H43 J49.H45 J49.H47 J49.H49 J55.A1 J55.A3 J55.A5 J55.A7 J55.A9 J55.A10 J55.A11 J55.A12 J55.A13 J55.A14 J55.A15 J55.A16 J55.A17 J55.A18 J55.A19 J55.A20 J55.A21 J55.A22 J55.A23 J55.A24 J55.A25 J55.A26 J55.A27 J55.A28 J55.A29 J55.A30 J55.A31 J55.A32 J55.A33 J55.A34 J55.A35 J55.A36 J55.A37 J55.A38 J55.A39 J55.A40 J55.A41 J55.A42 J55.A43 J55.A44 J55.A45 J55.A46 J55.A47 J55.A48 J55.A49 J55.A50 J55.B2 J55.B4 J55.B6 J55.B8 J55.B10 J55.B12 J55.B13 J55.B14 J55.B15 J55.B17 J55.B18 J55.B19 J55.B20 J55.B22 J55.B23 J55.B24 J55.B25 J55.B27 J55.B28 J55.B29 J55.B30 J55.B32 J55.B33 J55.B34 J55.B35 J55.B37 J55.B38 J55.B39 J55.B40 J55.B42 J55.B43 J55.B44 J55.B45 J55.B47 J55.B48 J55.B49 J55.B50 J55.C1 J55.C3 J55.C5 J55.C7 J55.C9 J55.C10 J55.C12 J55.C13 J55.C14 J55.C15 J55.C17 J55.C18 J55.C19 J55.C20 J55.C22 J55.C23 J55.C24 J55.C25 J55.C27 J55.C28 J55.C29 J55.C30 J55.C32 J55.C33 J55.C34 J55.C35 J55.C37 J55.C38 J55.C39 J55.C40 J55.C42 J55.C43 J55.C44 J55.C45 J55.C47 J55.C48 J55.C49 J55.C50 J55.D2 J55.D4 J55.D6 J55.D8 J55.D10 J55.D11 J55.D12 J55.D13 J55.D14 J55.D15 J55.D16 J55.D17 J55.D18 J55.D19 J55.D20 J55.D21 J55.D22 J55.D23 J55.D24 J55.D25 J55.D26 J55.D27 J55.D28 J55.D29 J55.D30 J55.D31 J55.D32 J55.D33 J55.D34 J55.D35 J55.D36 J55.D37 J55.D38 J55.D39 J55.D40 J55.D41 J55.D42 J55.D43 J55.D44 J55.D45 J55.D46 J55.D47 J55.D48 J55.D49 J55.D50 J55.E1 J55.E3 J55.E5 J55.E7 J55.E9 J55.E10 J55.E11 J55.E12 J55.E13 J55.E14 J55.E15 J55.E16 J55.E17 J55.E18 J55.E19 J55.E20 J55.E21 J55.E22 J55.E23 J55.E24 J55.E25 J55.E26 J55.E27 J55.E28 J55.E29 J55.E30 J55.E31 J55.E32 J55.E33 J55.E34 J55.E35 J55.E36 J55.E37 J55.E38 J55.E39 J55.E40 J55.E41 J55.E42 J55.E43 J55.E44 J55.E45 J55.E46 J55.E47 J55.E48 J55.E49 J55.E50 J55.F2 J55.F4 J55.F6 J55.F8 J55.F10 J55.F11 J55.F12 J55.F13 J55.F15 J55.F16 J55.F17 J55.F18 J55.F20 J55.F21 J55.F22 J55.F23 J55.F25 J55.F26 J55.F27 J55.F28 J55.F30 J55.F31 J55.F32 J55.F33 J55.F35 J55.F36 J55.F37 J55.F38 J55.F40 J55.F41 J55.F42 J55.F43 J55.F45 J55.F46 J55.F47 J55.F48 J55.F50 J55.G1 J55.G3 J55.G5 J55.G7 J55.G9 J55.G10 J55.G11 J55.G12 J55.G13 J55.G15 J55.G16 J55.G17 J55.G18 J55.G20 J55.G21 J55.G22 J55.G23 J55.G25 J55.G26 J55.G27 J55.G28 J55.G30 J55.G31 J55.G32 J55.G33 J55.G35 J55.G36 J55.G37 J55.G38 J55.G40 J55.G41 J55.G42 J55.G43 J55.G45 J55.G46 J55.G47 J55.G48 J55.G50 J55.H2 J55.H4 J55.H6 J55.H8 J55.H10 J55.H11 J55.H12 J55.H13 J55.H14 J55.H15 J55.H16 J55.H17 J55.H18 J55.H19 J55.H20 J55.H21 J55.H22 J55.H23 J55.H24 J55.H25 J55.H26 J55.H27 J55.H28 J55.H29 J55.H30 J55.H31 J55.H32 J55.H33 J55.H34 J55.H35 J55.H36 J55.H37 J55.H38 J55.H39 J55.H40 J55.H41 J55.H42 J55.H43 J55.H44 J55.H45 J55.H46 J55.H47 J55.H48 J55.H49 J55.H50 J56.9 J56.10 J57.9 J57.10 J58.2 J58.3 J59.2 J59.3 J60.2 J60.3 J61.2 J61.3 J62.2 J62.3 J63.2 J63.3 J64.2 J64.3 J65.2 J65.3 J66.2 J66.3 J67.2 J67.3 J68.2 J68.3 J69.2 J69.3 JHC1.9 JHC1.10 JHC2.9 JHC2.10 JHC3.9 JHC3.10 JHC4.9 JHC4.10 JHC5.9 JHC5.10 JHC6.9 JHC6.10 JHC7.9 JHC7.10 JHC8.9 JHC8.10 U1.2 U1.5 U2.1 U3.2 U3.5 U4.1 U5.2 U5.5 U6.2 U6.5 U7.2 U7.5 U8.1 U9.2 U9.5 U10.1 U11.2 U11.5 U12.2 U12.5 U13.1 U14.1 U15.1 U16.1
VCC12_SW: C25.1 C26.1 C27.1 C36.1 C37.1 C38.1 J48.22 J48.24 J55.A6 J55.B7 J55.C6 J55.D7 J55.E6 J55.F7 J55.G6 J55.H7
ADC224_T0_CH0_N: J49.F40 JHC5.2
ADC224_T0_CH0_P: J49.G40 JHC5.1
ADC224_T0_CH1_N: J49.B37 JHC6.2
ADC224_T0_CH1_P: J49.C37 JHC6.1
ADC224_T0_CH2_N: J49.F35 JHC5.4
ADC224_T0_CH2_P: J49.G35 JHC5.3
ADC224_T0_CH3_N: J49.B32 JHC6.4
ADC224_T0_CH3_P: J49.C32 JHC6.3
ADC225_T1_CH0_N: J49.F30 JHC5.6
ADC225_T1_CH0_P: J49.G30 JHC5.5
ADC225_T1_CH1_N: J49.B27 JHC6.6
ADC225_T1_CH1_P: J49.C27 JHC6.5
ADC225_T1_CH2_N: J49.F25 JHC5.8(P8)
ADC225_T1_CH2_P: J49.G25 JHC5.7
ADC225_T1_CH3_N: J49.B22 JHC6.8(P8)
ADC225_T1_CH3_P: J49.C22 JHC6.7
ADC226_T2_CH0_N: J49.F20 JHC7.2
ADC226_T2_CH0_P: J49.G20 JHC7.1
ADC226_T2_CH1_N: J49.B17 JHC8.2
ADC226_T2_CH1_P: J49.C17 JHC8.1
ADC226_T2_CH2_N: J49.F15 JHC7.4
ADC226_T2_CH2_P: J49.G15 JHC7.3
ADC226_T2_CH3_N: J49.B12 JHC8.4
ADC226_T2_CH3_P: J49.C12 JHC8.3
ADC227_T3_CH0_N: J49.F10 JHC7.6
ADC227_T3_CH0_P: J49.G10 JHC7.5
ADC227_T3_CH1_N: J49.B7 JHC8.6
ADC227_T3_CH1_P: J49.C7 JHC8.5
ADC227_T3_CH2_N: J49.F5 JHC7.8(P8)
ADC227_T3_CH2_P: J49.G5 JHC7.7
ADC227_T3_CH3_N: J49.B2 JHC8.8(P8)
ADC227_T3_CH3_P: J49.C2 JHC8.7
ADCIO_00: J21.1 J49.A47
ADCIO_01: J21.3 J49.A49
ADCIO_02: J21.7 J49.B46
ADCIO_03: J21.9(P9) J49.B48
ADCIO_04: J21.13 J49.C47
ADCIO_05: J21.15 J49.C49
ADCIO_06: J21.19 J49.D46
ADCIO_07: J21.21 J49.D48
ADCIO_08: J23.1 J49.E47
ADCIO_09: J23.3 J49.E49
ADCIO_10: J21.4 J49.F46
ADCIO_11: J21.6 J49.F48
ADCIO_12: J21.10 J49.G47
ADCIO_13: J21.12 J49.G49
ADCIO_14: J21.16 J49.H46
ADCIO_15: J21.18 J49.H48
ADCIO_16: J21.22
ADCIO_17: J21.24
ADCIO_18: J23.4
ADCIO_19: J23.6
DAC228_T0_CH0_N: J55.F49 JHC1.2
DAC228_T0_CH0_P: J55.G49 JHC1.1
DAC228_T0_CH1_N: J55.B46 JHC2.2
DAC228_T0_CH1_P: J55.C46 JHC2.1
DAC228_T0_CH2_N: J55.F44 JHC1.4
DAC228_T0_CH2_P: J55.G44 JHC1.3
DAC228_T0_CH3_N: J55.B41 JHC2.4
DAC228_T0_CH3_P: J55.C41 JHC2.3
DAC229_T1_CH0_N: J55.F39 JHC1.6
DAC229_T1_CH0_P: J55.G39 JHC1.5
DAC229_T1_CH1_N: J55.B36 JHC2.6
DAC229_T1_CH1_P: J55.C36 JHC2.5
DAC229_T1_CH2_N: J55.F34 JHC1.8(P8)
DAC229_T1_CH2_P: J55.G34 JHC1.7
DAC229_T1_CH3_N: J55.B31 JHC2.8(P8)
DAC229_T1_CH3_P: J55.C31 JHC2.7
DAC230_T2_CH0_N: J55.F29 JHC3.2
DAC230_T2_CH0_P: J55.G29 JHC3.1
DAC230_T2_CH1_N: J55.B26 JHC4.2
DAC230_T2_CH1_P: J55.C26 JHC4.1
DAC230_T2_CH2_N: J55.F24 JHC3.4
DAC230_T2_CH2_P: J55.G24 JHC3.3
DAC230_T2_CH3_N: J55.B21 JHC4.4
DAC230_T2_CH3_P: J55.C21 JHC4.3
DAC231_T3_CH0_N: J55.F19 JHC3.6
DAC231_T3_CH0_P: J55.G19 JHC3.5
DAC231_T3_CH1_N: J55.B16 JHC4.6
DAC231_T3_CH1_P: J55.C16 JHC4.5
DAC231_T3_CH2_N: J55.F14 JHC3.8(P8)
DAC231_T3_CH2_P: J55.G14 JHC3.7
DAC231_T3_CH3_N: J55.B11 JHC4.8(P8)
DAC231_T3_CH3_P: J55.C11 JHC4.7
DAC_AVTT_BUS: C42.1 C43.1 J48.12 J48.14 J55.F1
DACIO_00: J44.1 J55.A2
DACIO_01: J44.3 J55.A4
DACIO_02: J44.7 J55.B3
DACIO_03: J44.9(P9) J55.B5
DACIO_04: J44.13 J55.C2
DACIO_05: J44.15 J55.C4
DACIO_06: J44.19 J55.D3
DACIO_07: J44.21 J55.D5
DACIO_08: J48.1 J55.E2
DACIO_09: J48.3 J55.E4
DACIO_10: J44.4 J55.F3
DACIO_11: J44.6 J55.F5
DACIO_12: J44.10 J55.G2
DACIO_13: J44.12 J55.G4
DACIO_14: J44.16 J55.H3
DACIO_15: J44.18 J55.H5
DACIO_16: J44.22
DACIO_17: J44.24
DACIO_18: J48.4
DACIO_19: J48.6
EAST_TC_LAYER2_6INCH_N: J57.5 J57.6
EAST_TC_LAYER2_6INCH_P: J57.7 J57.8(P8)
EAST_TC_LAYER4_6INCH_N: J57.1 J57.2
EAST_TC_LAYER4_6INCH_P: J57.3 J57.4
HBF_DAC_01_N: C16.2 J30.1
HFB_ADC_01: J4.1 U2.2
HFB_ADC_01_N: C4.2 J6.1
HFB_ADC_01_P: C2.2 J2.1
HFB_ADC_02: J34.1 U10.2
HFB_ADC_02_N: C20.2 J36.1
HFB_ADC_02_P: C18.2 J32.1
HFB_DAC_01: J27.1 U8.2
HFB_DAC_01_P: C14.2 J28.1
HFB_DAC_02: J9.1 U4.2
HFB_DAC_02_N: C8.2 J12.1
HFB_DAC_02_P: C6.2 J10.1
LFB_ADC_01: J13.1 U5.6
LFB_ADC_01_N: C10.2 J15.1
LFB_ADC_01_P: C9.2 J14.1
LFB_ADC_02: J17.1 U6.6
LFB_ADC_02_N: C12.2 J18.1
LFB_ADC_02_P: C11.2 J16.1
LFB_DAC_01_N: C22.2 J39.1
LFB_DAC_01_P: C21.2 J37.1
LFB_DAC_02_N: C24.2 J42.1
LFB_DAC_02_P: C23.2 J41.1
LMFB_DAC_01: J38.1 U11.6
LMFB_DAC_02: J40.1 U12.6
MFB_ADC_01: J3.1 U1.1
MFB_ADC_01_N: C3.2 J5.1
MFB_ADC_01_P: C1.2 J1.1
MFB_ADC_02: J7.1 U3.1
MFB_ADC_02_N: C7.2 J11.1
MFB_ADC_02_P: C5.2 J8.1
MFB_DAC_01: J25.1 U7.1
MFB_DAC_01_N: C15.2 J29.1
MFB_DAC_01_P: C13.2 J26.1
MFB_DAC_02: J33.1 U9.1
MFB_DAC_02_N: C19.2 J35.1
MFB_DAC_02_P: C17.2 J31.1
RFMC_2_0_I2C_SCL: J49.B50
RFMC_2_0_I2C_SDA: J49.D50
RFMCP_I2C_SCL: J23.22
RFMCP_I2C_SDA: J23.24
SHBF_DAC_01_N: C49.2 J66.1
SHFB_ADC_01: J59.1 U13.2
SHFB_ADC_01_N: C45.2 J60.1
SHFB_ADC_01_P: C44.2 J58.1
SHFB_ADC_02: J62.1 U14.2
SHFB_ADC_02_N: C47.2 J63.1
SHFB_ADC_02_P: C46.2 J61.1
SHFB_DAC_01: J65.1 U15.2
SHFB_DAC_01_P: C48.2 J64.1
SHFB_DAC_02: J68.1 U16.2
SHFB_DAC_02_N: C51.2 J69.1
SHFB_DAC_02_P: C50.2 J67.1
UTIL_3V3: C29.1 C30.1 C31.1 J23.21 J23.23 J49.A45 J49.B44 J49.C45 J49.D44 J49.E45 J49.F44 J49.G45 J49.H44
UTIL_5V0: C39.1 C40.1 C41.1 J48.17 J48.19 J55.A8 J55.B9 J55.C8 J55.D9 J55.E8 J55.F9 J55.G8 J55.H9(9)
VADJ_ADC: C32.1 C33.1 J23.13 J23.15 J49.F50 J49.H50
VADJ_DAC: C34.1 C35.1 J48.9(P9) J48.11 J55.B1 J55.D1
VCM01_224: J49.A43
VCM01_225: J49.C43
VCM01_226: J49.E43
VCM01_227: J49.G43
VCM23_224: J49.B42
VCM23_225: J49.D42
VCM23_226: J49.F42
VCM23_227: J49.H42
WEST_TC_LAYER2_6INCH_N: J56.5 J56.8(P8)
WEST_TC_LAYER2_6INCH_P: J56.6 J56.7
WEST_TC_LAYER4_6INCH_N: J56.1 J56.4
WEST_TC_LAYER4_6INCH_P: J56.2 J56.3
N21418030: C1.1 U1.3
N21418037: C3.1 U1.4(Q2)
N21418063: C5.1 U3.3
N21418070: C7.1 U3.4(Q2)
N21418125: C11.1 U6.3(S-)
N21418132: C12.1 U6.4
N22112796: C13.1 U7.3
N22112801: C15.1 U7.4(Q2)
N22112826: C21.1 U11.3(S-)
N22112831: C22.1 U11.4
N22112883: C17.1 U9.3
N22112888: C19.1 U9.4(Q2)
N22123695: C2.1 U2.3
N22123781: C4.1 U2.4(Q2)
N22125258: C14.1 U8.3
N22125344: C16.1 U8.4(Q2)
N22561101: C6.1 U4.3
N22561181: C8.1 U4.4(Q2)
N22561975: C18.1 U10.3
N22562055: C20.1 U10.4(Q2)
N22564284: C9.1 U5.3(S-)
N22564340: C10.1 U5.4
N22565110: C23.1 U12.3(S-)
N22565166: C24.1 U12.4
N22615481: C44.1 U13.3
N22615525: C45.1 U13.4(Q2)
N22615638: C46.1 U14.3
N22615682: C47.1 U14.4(Q2)
N22616561: C48.1 U15.3
N22616605: C49.1 U15.4(Q2)
N22616718: C50.1 U16.3
N22616762: C51.1 U16.4(Q2)

Pads without a net: J23 5 7 8 9 10 11 12; J55 H1; MH1 1; MH2 1; MH3 1; MH4 1; NOREF 1; NOREF#2 1; NOREF#5 1; NOREF#6 1; NOREF#7 1; NOREF#9 1; NOREF#13 1; NOREF#14 1; NOREF#15 1; NOREF#16 1; NOREF#19 1; NOREF#20 1; NOREF#21 1; NOREF#22 1; NOREF#23 1; NOREF#24 1; NOREF#25 1; NOREF#26 1; NOREF#27 1; NOREF#28 1; NOREF#29 1; NOREF#31 1; NOREF#32 1; NOREF#33 1; NOREF#34 1; NOREF#35 1; NOREF#36 1; NOREF#39 1; NOREF#40 1; NOREF#42 1; NOREF#44 1; NOREF#46 1; U1 6; U3 6; U5 1; U6 1; U7 6; U9 6; U11 1; U12 1

## Via types
v1: diameter 0.406, hole 0.152, TOP to L02_RF_SIG, 122 vias
v2: diameter 0.406, hole 0.127, TOP to L02_RF_SIG, 78 vias
v3: diameter 0.457, hole 0.203, TOP to BOTTOM, 1088 vias
v4: diameter 0.406, hole 0.203, TOP to BOTTOM, 3139 vias
v5: diameter 0.457, hole 0.249, TOP to BOTTOM, 529 vias
v6: diameter 0.508, hole 0.254, TOP to BOTTOM, 1809 vias
v7: diameter 1.27, hole 0.889, TOP to BOTTOM, 32 vias
v8: diameter 0.483, hole 0.249, TOP to BOTTOM, 1 via

## Routing (per net, layer and track width the routed paths; a pad name or vN(x,y) marks a point on that pad's centre or on a via; arc(x,y) is an arc through that point)
GND: length 789.1
  TOP w0.127: 82.3,174.43 82.47,174.68 ; 82.47,174.68 82.47,174.81 82.16,175.12 82.16,175.88 82.67,176.39 83.43,176.39 83.94,176.9 84.44,176.39 85.21,176.39 85.71,175.88 85.71,175.12 85.21,174.61 85.21,173.85 84.7,173.34 83.17,173.34 82.67,173.85 82.67,174.48 82.47,174.68 ; 116.76,174.68 116.76,174.81 116.45,175.12 116.45,175.88 116.96,176.39 117.72,176.39 118.23,176.9 118.73,176.39 119.5,176.39 120,175.88 120,175.12 119.5,174.61 119.5,173.85 118.99,173.34 117.46,173.34 116.96,173.85 116.96,174.48 116.76,174.68 ; 116.76,174.68 116.59,174.43 ; 84.95,55.39 84.66,55.39 ; 84.66,55.39 84.66,55.62 85.11,56.07 85.11,56.79 84.57,57.33 84.03,57.87 83.31,57.87 82.86,57.42 82.77,57.33 82.05,57.33 81.51,56.79 81.51,56.07 81.96,55.62 82.05,55.53 82.05,54.81 82.77,54.81 82.86,54.72 83.31,54.27 84.03,54.27 84.57,54.81 84.57,55.26 84.66,55.35 84.66,55.39 ; 67.63,144.43 67.85,144.64 ; 67.85,144.64 67.83,144.66 67.83,144.79 67.52,145.1 67.52,145.86 68.03,146.37 68.79,146.37 69.3,146.88 69.8,146.37 70.57,146.37 71.07,145.86 71.07,145.1 70.57,144.59 70.57,143.83 70.06,143.32 68.53,143.32 68.03,143.83 68.03,144.46 67.85,144.64 ; 84.02,152.96 84.02,153.24 84.47,153.69 84.47,154.4 83.93,154.94 83.39,155.48 82.67,155.48 82.22,155.03 82.13,154.94 81.41,154.94 80.87,154.4 80.87,153.69 81.32,153.24 81.41,153.15 81.41,152.43 82.13,152.43 82.22,152.34 82.67,151.89 83.39,151.89 83.93,152.43 83.93,152.87 84.02,152.96 ; 84.02,152.96 v4(84.24,152.81) ; 84.02,152.96 84.22,152.82 ; 51.96,115.98 51.75,116.12 ; 67.12,204.33 67.31,204.14 67.31,203.5 67.82,203 69.34,203 69.85,203.5 69.85,204.27 70.36,204.77 70.36,205.54 69.85,206.04 69.09,206.04 68.58,206.55 68.07,206.04 67.31,206.04 66.8,205.54 66.8,204.77 67.12,204.46 67.12,204.33 ; 67.12,204.33 66.91,204.1 ; 49.94,152.79 49.73,152.96 ; 49.73,152.96 49.73,153.24 50.18,153.69 50.18,154.4 49.64,154.94 49.1,155.48 48.38,155.48 47.93,155.03 47.84,154.94 47.12,154.94 46.58,154.4 46.58,153.69 47.03,153.24 47.12,153.15 47.12,152.43 47.84,152.43 47.93,152.34 48.38,151.89 49.1,151.89 49.64,152.43 49.64,152.87 49.73,152.96 ; 49.73,152.96 v4(49.95,152.81) ; 67.2,242.98 66.99,243.12 ; 101.95,144.41 102.12,144.66 ; 102.12,144.66 102.12,144.79 101.81,145.1 101.81,145.86 102.32,146.37 103.08,146.37 103.59,146.88 104.09,146.37 104.86,146.37 105.36,145.86 105.36,145.1 104.86,144.59 104.86,143.83 104.35,143.32 102.82,143.32 102.32,143.83 102.32,144.46 ; 102.12,144.66 102.32,144.46 ; 99.9,182.98 99.9,183.26 100.35,183.71 100.35,184.42 99.81,184.96 99.27,185.5 98.55,185.5 98.1,185.05 98.01,184.96 97.29,184.96 96.75,184.42 96.75,183.71 97.2,183.26 97.29,183.17 97.29,182.45 98.01,182.45 98.1,182.36 98.55,181.91 99.27,181.91 99.81,182.45 99.81,182.89 99.9,182.98 ; 99.9,182.98 100.1,182.84 ; 101.23,204.08 101.41,204.33 ; 101.41,204.33 101.6,204.14 101.6,203.5 102.11,203 103.63,203 104.14,203.5 104.14,204.27 104.65,204.77 104.65,205.54 104.14,206.04 103.38,206.04 102.87,206.55 102.36,206.04 101.6,206.04 101.09,205.54 101.09,204.77 101.41,204.46 101.41,204.33 ; 102.32,144.46 102.09,144.4 ; 50.69,212.5 50.48,212.64 ; 84.98,115.98 84.77,116.12 ; 84.98,212.5 84.77,212.64 ; 100.22,242.98 100.01,243.12 ; 65.2,224.71 64.92,224.71 64.83,224.8 64.39,224.8 63.85,225.34 63.85,226.06 64.39,226.6 64.39,227.32 65.11,227.32 65.65,227.86 66.36,227.86 66.9,227.32 66.9,226.6 67.44,226.06 67.44,225.34 66.9,224.8 66.36,224.26 65.65,224.26 65.2,224.71 ; 67.43,46.85 67.23,47.04 67.23,47.17 66.92,47.48 66.92,48.25 67.43,48.75 68.19,48.75 68.7,49.26 69.2,48.75 69.97,48.75 70.47,48.25 70.47,47.48 69.97,46.98 69.97,46.21 69.46,45.71 67.93,45.71 67.43,46.21 67.43,46.85 ; 101.52,47.17 101.21,47.48 101.21,48.25 101.72,48.75 102.48,48.75 102.99,49.26 103.49,48.75 104.26,48.75 104.76,48.25 104.76,47.48 104.26,46.98 104.26,46.21 103.75,45.71 102.22,45.71 101.72,46.21 101.72,46.85 101.52,47.04 101.52,47.17 ; 102.11,106.48 101.6,106.98 101.6,107.62 101.41,107.81 101.41,107.94 101.09,108.25 101.09,109.02 101.6,109.52 102.36,109.52 102.87,110.03 103.38,109.52 104.14,109.52 104.65,109.02 104.65,108.25 104.14,107.75 104.14,106.98 103.63,106.48 102.11,106.48 ; 97.74,164.29 97.83,164.2 98.1,164.2 98.55,163.75 99.27,163.75 99.81,164.29 100.35,164.83 100.35,165.54 99.9,165.99 99.81,166.08 99.81,166.8 99.27,167.34 98.55,167.34 98.1,166.89 98.01,166.8 97.29,166.8 97.29,166.08 97.2,165.99 96.75,165.54 96.75,164.83 97.29,164.29 97.74,164.29 ; 119.33,19.37 120.1,19.37 120.6,18.86 120.6,18.1 120.1,17.59 120.1,16.83 119.59,16.32 118.06,16.32 117.56,16.83 117.56,17.46 117.36,17.66 117.36,17.79 117.05,18.1 117.05,18.86 117.56,19.37 118.32,19.37 118.83,19.88 119.33,19.37 ; 98.63,28.48 97.91,28.48 97.46,28.03 97.37,27.94 96.65,27.94 96.11,27.4 96.11,26.69 96.56,26.24 96.65,26.15 96.65,25.43 97.37,25.43 97.46,25.34 97.91,24.89 98.63,24.89 99.17,25.43 99.17,25.87 99.26,25.96 99.26,26.24 99.71,26.69 99.71,27.4 99.17,27.94 98.63,28.48 ; 49.14,193.78 48.69,194.23 48.41,194.23 48.32,194.32 47.88,194.32 47.34,194.86 47.34,195.58 47.79,196.03 47.88,196.12 47.88,196.84 48.6,196.84 48.69,196.93 49.14,197.38 49.85,197.38 50.39,196.84 50.39,196.12 50.48,196.03 50.93,195.58 50.93,194.86 50.39,194.32 49.85,193.78 49.14,193.78 ; 62.91,183.26 63,183.17 63,182.45 63.72,182.45 63.81,182.36 64.26,181.91 64.98,181.91 65.52,182.45 65.52,182.89 65.61,182.98 65.61,183.26 66.06,183.71 66.06,184.42 65.52,184.96 64.98,185.5 64.26,185.5 63.81,185.05 63.72,184.96 63,184.96 62.46,184.42 62.46,183.71 62.91,183.26 ; 62.62,88.3 62.08,87.76 62.08,87.05 62.53,86.6 62.62,86.51 62.62,85.79 63.34,85.79 63.43,85.7 63.88,85.25 64.6,85.25 65.14,85.79 65.14,86.23 65.23,86.32 65.23,86.6 65.68,87.05 65.68,87.76 65.14,88.3 64.6,88.84 63.88,88.84 63.43,88.39 63.34,88.3 62.62,88.3 ; 47.22,56.79 47.22,56.07 47.67,55.62 47.76,55.53 47.76,54.81 48.48,54.81 48.57,54.72 49.02,54.27 49.74,54.27 50.28,54.81 50.28,55.26 50.37,55.35 50.37,55.62 50.82,56.07 50.82,56.79 50.28,57.33 49.74,57.87 49.02,57.87 48.57,57.42 48.48,57.33 47.76,57.33 47.22,56.79 ; 83.39,131.54 83.93,132.08 84.47,132.62 84.47,133.33 84.02,133.78 83.93,133.87 83.93,134.59 83.39,135.13 82.67,135.13 82.22,134.68 82.13,134.59 81.41,134.59 81.41,133.87 81.32,133.78 80.87,133.33 80.87,132.62 81.41,132.08 81.86,132.08 81.95,131.99 82.22,131.99 82.67,131.54 83.39,131.54 ; 68.07,108.25 68.07,109.02 68.58,109.52 69.34,109.52 69.85,110.03 70.36,109.52 71.12,109.52 71.63,109.02 71.63,108.25 71.12,107.75 71.12,106.98 70.61,106.48 69.09,106.48 68.58,106.98 68.58,107.62 68.39,107.81 68.39,107.94 68.07,108.25 ; 97.85,224.8 97.41,224.8 96.87,225.34 96.87,226.06 97.41,226.6 97.41,227.32 98.13,227.32 98.67,227.86 99.38,227.86 99.92,227.32 99.92,226.6 100.46,226.06 100.46,225.34 99.92,224.8 99.38,224.26 98.67,224.26 98.22,224.71 97.94,224.71 97.85,224.8 ; 65.42,6.33 64.97,6.78 64.88,6.87 64.88,7.59 64.34,8.13 63.62,8.13 63.17,7.68 63.08,7.59 62.36,7.59 62.36,6.87 62.27,6.78 61.82,6.33 61.82,5.62 62.36,5.08 62.81,5.08 62.9,4.99 63.17,4.99 63.62,4.54 64.34,4.54 64.88,5.08 65.42,5.62 65.42,6.33 ; 82.17,100.32 82.89,100.32 83.43,100.86 84.14,100.86 84.68,100.32 84.68,99.6 85.22,99.06 85.22,98.34 84.68,97.8 84.14,97.26 83.43,97.26 82.98,97.71 82.7,97.71 82.61,97.8 82.17,97.8 81.63,98.34 81.63,99.06 82.17,99.6 82.17,100.32 ; 64.34,28.48 64.88,27.94 65.42,27.4 65.42,26.69 64.97,26.24 64.97,25.96 64.88,25.87 64.88,25.43 64.34,24.89 63.62,24.89 63.17,25.34 63.08,25.43 62.36,25.43 62.36,26.15 62.27,26.24 61.82,26.69 61.82,27.4 62.36,27.94 63.08,27.94 63.17,28.03 63.62,28.48 64.34,28.48 ; 81.51,37.19 81.51,37.91 81.96,38.36 82.05,38.45 82.05,39.17 82.77,39.17 82.86,39.26 83.31,39.71 84.03,39.71 84.57,39.17 84.57,38.45 84.66,38.36 85.11,37.91 85.11,37.19 84.57,36.65 84.03,36.11 83.31,36.11 82.86,36.56 82.59,36.56 82.5,36.65 82.05,36.65 81.51,37.19 ; 64.98,163.75 65.52,164.29 66.06,164.83 66.06,165.54 65.61,165.99 65.52,166.08 65.52,166.8 64.98,167.34 64.26,167.34 63.81,166.89 63.72,166.8 63,166.8 63,166.08 62.91,165.99 62.46,165.54 62.46,164.83 63,164.29 63.45,164.29 63.54,164.2 63.81,164.2 64.26,163.75 64.98,163.75 ; 99.71,5.62 99.17,5.08 98.63,4.54 97.91,4.54 97.46,4.99 97.19,4.99 97.1,5.08 96.65,5.08 96.11,5.62 96.11,6.33 96.56,6.78 96.65,6.87 96.65,7.59 97.37,7.59 97.46,7.68 97.91,8.13 98.63,8.13 99.17,7.59 99.17,6.87 99.26,6.78 99.71,6.33 99.71,5.62 ; 116.33,236.02 116.84,236.52 117.6,236.52 118.11,237.03 118.62,236.52 119.38,236.52 119.89,236.02 119.89,235.25 119.38,234.75 119.38,233.98 118.87,233.48 117.35,233.48 116.84,233.98 116.84,234.62 116.65,234.81 116.65,234.94 116.33,235.25 116.33,236.02 ; 84.68,196.12 84.68,196.84 84.14,197.38 83.43,197.38 82.98,196.93 82.89,196.84 82.17,196.84 82.17,196.12 82.08,196.03 81.63,195.58 81.63,194.86 82.17,194.32 82.61,194.32 82.7,194.23 82.98,194.23 83.43,193.78 84.14,193.78 84.68,194.32 85.22,194.86 85.22,195.58 84.77,196.03 84.68,196.12 ; 50.82,37.19 50.82,37.91 50.37,38.36 50.28,38.45 50.28,39.17 49.74,39.71 49.02,39.71 48.57,39.26 48.48,39.17 47.76,39.17 47.76,38.45 47.67,38.36 47.22,37.91 47.22,37.19 47.76,36.65 48.21,36.65 48.3,36.56 48.57,36.56 49.02,36.11 49.74,36.11 50.28,36.65 50.82,37.19 ; 100.11,85.18 99.58,84.64 98.86,84.64 98.41,85.09 98.32,85.18 97.6,85.18 97.6,85.9 97.51,85.99 97.06,86.44 97.06,87.15 97.6,87.69 98.32,87.69 98.41,87.78 98.86,88.23 99.58,88.23 100.11,87.69 100.65,87.15 100.65,86.44 100.2,85.99 100.2,85.71 100.11,85.62 100.11,85.18 ; 51.8,116.07 51.71,115.98 51.71,115.53 51.18,114.99 50.46,114.99 49.92,115.53 49.2,115.53 49.2,116.25 48.66,116.79 48.66,117.51 49.2,118.05 49.92,118.05 50.46,118.59 51.18,118.59 51.71,118.05 52.25,117.51 52.25,116.79 51.8,116.34 51.8,116.07 ; 50.7,212.71 50.7,212.99 51.15,213.44 51.15,214.15 50.61,214.69 50.07,215.23 49.35,215.23 48.9,214.78 48.81,214.69 48.09,214.69 47.56,214.15 47.56,213.44 48.01,212.99 48.09,212.9 48.09,212.18 48.81,212.18 48.9,212.09 49.35,211.64 50.07,211.64 50.61,212.18 50.61,212.62 50.7,212.71 ; 99.92,69.12 99.92,69.84 99.38,70.38 98.67,70.38 98.22,69.93 98.13,69.84 97.41,69.84 97.41,69.12 97.32,69.03 96.87,68.58 96.87,67.86 97.41,67.32 97.85,67.32 97.94,67.23 98.22,67.23 98.67,66.78 99.38,66.78 99.92,67.32 100.46,67.86 100.46,68.58 100.01,69.03 99.92,69.12 ; 83.27,19.37 84.03,19.37 84.54,19.88 85.04,19.37 85.81,19.37 86.31,18.86 86.31,18.1 85.81,17.59 85.81,16.83 85.3,16.32 83.77,16.32 83.27,16.83 83.27,17.46 83.07,17.66 83.07,17.79 82.76,18.1 82.76,18.86 83.27,19.37 ; 51.12,97.26 50.41,97.26 49.96,97.71 49.68,97.71 49.59,97.8 49.15,97.8 48.61,98.34 48.61,99.06 49.15,99.6 49.15,100.32 49.87,100.32 50.41,100.86 51.12,100.86 51.66,100.32 51.66,99.6 52.2,99.06 52.2,98.34 51.66,97.8 51.12,97.26 ; 81.41,79.17 81.92,79.68 82.68,79.68 83.19,80.19 83.69,79.68 84.45,79.68 84.96,79.17 84.96,78.41 84.45,77.9 84.45,77.14 83.95,76.63 82.42,76.63 81.92,77.14 81.92,77.77 81.72,77.97 81.72,78.1 81.41,78.41 81.41,79.17 ; 61.95,68.5 61.95,69.22 62.39,69.66 62.48,69.75 62.48,70.47 63.2,70.47 63.29,70.56 63.74,71.01 64.46,71.01 65,70.47 65,69.75 65.09,69.66 65.54,69.22 65.54,68.5 65,67.96 64.46,67.42 63.74,67.42 63.29,67.87 63.02,67.87 62.93,67.96 62.48,67.96 61.95,68.5 ; 47.57,132.08 47.66,131.99 47.93,131.99 48.38,131.54 49.1,131.54 49.64,132.08 50.18,132.62 50.18,133.33 49.73,133.78 49.64,133.87 49.64,134.59 49.1,135.13 48.38,135.13 47.93,134.68 47.84,134.59 47.12,134.59 47.12,133.87 47.03,133.78 46.58,133.33 46.58,132.62 47.12,132.08 47.57,132.08 ; 83.82,233.98 83.82,234.62 83.63,234.81 83.63,234.94 83.31,235.25 83.31,236.02 83.82,236.52 84.58,236.52 85.09,237.03 85.6,236.52 86.36,236.52 86.87,236.02 86.87,235.25 86.36,234.75 86.36,233.98 85.85,233.48 84.33,233.48 83.82,233.98 ; 97.46,243.25 96.92,243.79 96.92,244.51 97.46,245.05 98.18,245.05 98.72,245.59 99.44,245.59 99.97,245.05 100.51,244.51 100.51,243.79 100.06,243.34 100.06,243.07 99.97,242.98 99.97,242.53 99.44,241.99 98.72,241.99 98.18,242.53 97.46,242.53 97.46,243.25 ; 84.99,212.71 84.99,212.99 85.44,213.44 85.44,214.15 84.9,214.69 84.36,215.23 83.64,215.23 83.19,214.78 83.1,214.69 82.38,214.69 81.85,214.15 81.85,213.44 82.3,212.99 82.38,212.9 82.38,212.18 83.1,212.18 83.19,212.09 83.64,211.64 84.36,211.64 84.9,212.18 84.9,212.62 84.99,212.71 ; 117.35,76 116.84,76.5 116.84,77.14 116.65,77.33 116.65,77.46 116.33,77.77 116.33,78.54 116.84,79.04 117.6,79.04 118.11,79.55 118.62,79.04 119.38,79.04 119.89,78.54 119.89,77.77 119.38,77.27 119.38,76.5 118.87,76 117.35,76 ; 63.9,244.51 64.44,245.05 65.16,245.05 65.7,245.59 66.42,245.59 66.95,245.05 67.49,244.51 67.49,243.79 67.04,243.34 67.04,243.07 66.95,242.98 66.95,242.53 66.42,241.99 65.7,241.99 65.16,242.53 64.44,242.53 64.44,243.25 63.9,243.79 63.9,244.51 ; 84.82,116.34 84.82,116.07 84.73,115.98 84.73,115.53 84.2,114.99 83.48,114.99 82.94,115.53 82.22,115.53 82.22,116.25 81.68,116.79 81.68,117.51 82.22,118.05 82.94,118.05 83.48,118.59 84.2,118.59 84.73,118.05 85.27,117.51 85.27,116.79 84.82,116.34
  TOP w0.203: C34.2 v4(37.47,12.24) ; C35.2 v4(35.56,12.81) ; C36.2 v4(46.99,26.49) ; C31.2 v4(49.53,235.7) ; C42.2 v4(40.01,25.22) ; C33.2 v4(40.64,235.7) ; C27.2 v4(50.16,24.02) ; C43.2 v4(38.1,24.02) ; C38.2 v4(48.9,24.02) ; C39.2 v4(48.26,12.24) ; C25.2 v4(43.18,26.49) ; C41.2 v4(45.09,12.81) ; C40.2 v4(46.35,12.81) ; C32.2 v4(42.55,235.13) ; C29.2 v4(52.7,235.13) ; C37.2 v4(52.7,24.02) ; C26.2 v4(51.44,24.02) ; C30.2 v4(50.8,235.7)
  TOP w0.318: 108.95,76.71 108.45,77.21 108.25,77.21 U4.1 ; U13.1 75.23,234.69 75.43,234.69 75.6,234.52 ; 75.6,234.52 75.95,234.17 ; 75.6,234.52 v4(75.61,234.53) ; 93.38,107.52 93.21,107.69 93.01,107.69 U15.1 ; 93.38,107.52 v4(93.39,107.53) ; 93.38,107.52 93.73,107.17 ; 60.36,107.52 60.19,107.69 59.99,107.69 U16.1 ; 60.36,107.52 60.71,107.17 ; 60.36,107.52 v4(60.37,107.53) ; U8.1 73.33,77.85 73.52,77.85 74.15,77.22 ; 93.71,203.71 93.21,204.21 93.01,204.21 U2.1 ; U10.1 58.72,204.21 58.92,204.21 59.44,203.69 ; U14.1 108.25,234.69 108.45,234.69 108.62,234.52 ; 108.62,234.52 108.97,234.17 ; 108.62,234.52 v4(108.63,234.53)
  TOP w0.33: v4(73.66,175.12) 73.66,175.9 ; v4(107.95,175.12) 107.95,175.9 ; v4(73.66,174.13) 73.66,173.35 ; v4(92.71,46.5) 92.71,45.72 ; v4(92.71,47.48) 92.71,48.39 ; v4(58.42,46.5) 58.42,45.59 ; v4(58.42,47.48) 58.42,48.26 ; v4(107.95,174.13) 107.95,173.35
  TOP w0.508: 62.61,85.77 J28.2 ; 49.18,115.51 J67.2 ; J33.2 68.7,49.29 ; 82.03,39.19 J29.2 ; 84.73,118.05 J64.3 ; 99.92,67.32 J12.3 ; J41.2 47.1,134.61 ; J11.2 62.98,166.82 ; 69.85,110.06 J68.2 ; 51.66,97.8 J69.3 ; 50.61,214.69 J32.3 ; J40.2 69.3,146.9 ; 84.57,36.65 J29.3 ; 84.68,194.32 J6.3 ; 85.09,233.48 J59.3 ; J4.3 102.87,203 ; J9.3 118.11,76 ; J31.2 47.74,54.79 ; 102.87,106.48 J65.3 ; 49.64,132.08 J41.3 ; 118.11,237.06 J62.2 ; 47.74,39.19 J35.2 ; J38.3 84.54,16.32 ; J10.2 97.58,85.16 ; 102.87,110.06 J65.2 ; 97.44,242.51 J61.2 ; 65.14,88.3 J28.3 ; 64.88,5.08 J37.3 ; J2.2 82.37,212.16 ; 51.71,118.05 J67.3 ; J3.3 118.23,173.34 ; 96.63,7.61 J14.2 ; J27.2 83.19,80.21 ; J25.2 102.99,49.29 ; J9.2 118.11,79.58 ; 64.37,227.34 J60.2 ; 97.27,182.43 J1.2 ; 65.52,164.29 J11.3 ; 85.09,237.06 J59.2 ; J37.2 62.34,7.61 ; 84.68,97.8 J66.3 ; 97.39,69.86 J12.2 ; 64.88,27.94 J39.3 ; 82.03,54.79 J26.2 ; 82.15,100.34 J66.2 ; 99.17,5.08 J14.3 ; J16.2 81.39,134.61 ; 48.08,212.16 J32.2 ; J38.2 84.54,19.9 ; 66.95,245.05 J58.3 ; J25.3 102.99,45.71 ; J13.3 118.83,16.32 ; 47.1,152.41 J42.2 ; 99.81,184.96 J1.3 ; J34.3 68.58,203 ; 84.57,57.33 J26.3 ; 83.93,132.08 J16.3 ; 96.63,25.41 J15.2 ; 64.42,242.51 J58.2 ; 65,67.96 J30.3 ; 50.28,57.33 J31.3 ; J17.2 103.59,146.9 ; J18.2 81.39,152.41 ; J7.3 83.94,173.34 ; 97.39,227.34 J63.2 ; 99.92,224.8 J63.3 ; J39.2 62.34,25.41 ; 82.15,196.86 J6.2 ; 82.2,115.51 J64.2 ; 69.85,106.48 J68.3 ; J17.3 103.59,143.32 ; J27.3 83.19,76.63 ; 49.13,100.34 J69.2 ; J7.2 83.94,176.92 ; J33.3 68.7,45.71 ; 50.39,194.32 J36.3 ; 65.52,184.96 J8.3 ; 47.86,196.86 J36.2 ; J3.2 118.23,176.92 ; 66.9,224.8 J60.3 ; 100.11,87.69 J10.3 ; 62.98,182.43 J8.2 ; J30.2 62.47,70.49 ; 99.17,27.94 J15.3 ; J13.2 118.83,19.9 ; 49.64,154.94 J42.3 ; 84.9,214.69 J2.3 ; 99.81,164.29 J5.3 ; 99.97,245.05 J61.3 ; J5.2 97.27,166.82 ; J40.3 69.3,143.32 ; 83.93,154.94 J18.3 ; 50.28,36.65 J35.3 ; 118.11,233.48 J62.3 ; J4.2 102.87,206.58 ; J34.2 68.58,206.58
  TOP w0.635: v6(58.4,145.1) 58.4,147.17 ; v6(73.64,18.1) 73.64,19.92 ; v6(92.69,141.92) 92.69,139.93 ; v6(107.93,14.92) 107.93,13.23 ; v6(107.93,18.1) 107.93,19.83 ; v6(58.4,141.92) 58.4,140.23 ; v6(73.64,14.92) 73.64,13.1 ; v6(92.69,145.1) 92.69,146.92
  vias: v3(3.43,123.52) v3(3.43,121.52) v3(3.43,119.52) v3(3.43,117.52) v3(3.43,115.52) v3(3.89,113.33) v3(4.44,125.25) v3(5.35,123.11) v3(5.35,121.11) v3(5.35,119.11) v3(5.35,117.11) v3(5.35,115.11) v3(5.54,219.79) v3(5.54,217.25) v3(5.54,214.71) v3(5.54,212.17) v3(5.54,209.63) v3(5.54,208.36) v3(5.54,207.09) v3(5.54,205.82) v3(5.54,204.55) v3(5.54,203.28) v3(5.54,202.01) v3(5.54,200.74) v3(5.54,199.47) v3(5.54,198.2) v3(5.54,196.93) v3(5.54,195.66) v3(5.54,194.39) v3(5.54,193.12) v3(5.54,191.85) v3(5.54,190.58) v3(5.54,189.31) v3(5.54,188.04) v3(5.54,186.77) v3(5.54,185.5) v3(5.54,184.23) v3(5.54,182.96) v3(5.54,181.69) v3(5.54,180.42) v3(5.54,179.15) v3(5.54,177.88) v3(5.54,176.61) v3(5.54,175.34) v3(5.54,174.07) v3(5.54,172.8) v3(5.54,171.53) v3(5.54,170.26) v3(5.54,168.99) v3(5.54,167.72) v3(5.54,166.45) v3(5.54,165.18) v3(5.54,163.91) v3(5.54,162.64) v3(5.54,161.37) v3(5.54,160.1) v3(5.54,158.83) v3(5.54,157.56) v3(5.54,92.79) v3(5.54,91.52) v3(5.54,90.25) v3(5.54,88.98) v3(5.54,87.71) v3(5.54,86.44) v3(5.54,85.17) v3(5.54,83.9) v3(5.54,82.63) v3(5.54,81.36) v3(5.54,80.09) v3(5.54,78.82) v3(5.54,77.55) v3(5.54,76.28) v3(5.54,75.01) v3(5.54,73.74) v3(5.54,72.47) v3(5.54,71.2) v3(5.54,69.93) v3(5.54,68.66) v3(5.54,67.39) v3(5.54,66.12) v3(5.54,64.85) v3(5.54,63.58) v3(5.54,62.31) v3(5.54,61.04) v3(5.54,59.77) v3(5.54,58.5) v3(5.54,57.23) v3(5.54,55.96) v3(5.54,54.69) v3(5.54,53.42) v3(5.54,52.15) v3(5.54,50.88) v3(5.54,49.61) v3(5.54,48.34) v3(5.54,47.07) v3(5.54,45.8) v3(5.54,44.53) v3(5.54,43.26) v3(5.54,41.99) v3(5.54,40.72) v3(5.54,38.18) v3(5.54,35.64) v3(5.54,33.1) v3(5.54,30.56) v3(5.59,112.44) v3(5.85,126.66) v3(6.59,124.68) v3(6.81,218.52) v3(6.81,215.98) v3(6.81,213.44) v3(6.81,210.9) v3(6.81,208.36) v3(6.81,207.09) v3(6.81,205.82) v3(6.81,204.55) v3(6.81,202.01) v3(6.81,200.74) v3(6.81,199.47) v3(6.81,198.2) v3(6.81,195.66) v3(6.81,194.39) v3(6.81,193.12) v3(6.81,191.85) v3(6.81,189.31) v3(6.81,188.04) v3(6.81,186.77) v3(6.81,185.5) v3(6.81,182.96) v3(6.81,181.69) v3(6.81,180.42) v3(6.81,179.15) v3(6.81,176.61) v3(6.81,175.34) v3(6.81,174.07) v3(6.81,172.8) v3(6.81,170.26) v3(6.81,168.99) v3(6.81,167.72) v3(6.81,166.45) v3(6.81,163.91) v3(6.81,162.64) v3(6.81,161.37) v3(6.81,160.1) v3(6.81,157.56) v3(6.81,92.79) v3(6.81,91.52) v3(6.81,90.25) v3(6.81,88.98) v3(6.81,86.44) v3(6.81,85.17) v3(6.81,83.9) v3(6.81,82.63) v3(6.81,80.09) v3(6.81,78.82) v3(6.81,77.55) v3(6.81,76.28) v3(6.81,73.74) v3(6.81,72.47) v3(6.81,71.2) v3(6.81,69.93) v3(6.81,67.39) v3(6.81,66.12) v3(6.81,64.85) v3(6.81,63.58) v3(6.81,61.04) v3(6.81,59.77) v3(6.81,58.5) v3(6.81,57.23) v3(6.81,54.69) v3(6.81,53.42) v3(6.81,52.15) v3(6.81,50.88) v3(6.81,48.34) v3(6.81,47.07) v3(6.81,45.8) v3(6.81,44.53) v3(6.81,41.99) v3(6.81,39.45) v3(6.81,36.91) v3(6.81,34.37) v3(6.81,31.83) v3(7.21,114.36) v3(7.59,112.44) v3(7.81,127.09) v3(8.08,219.79) v3(8.08,217.25) v3(8.08,214.71) v3(8.08,212.17) v3(8.08,209.63) v3(8.08,208.36) v3(8.08,207.09) v3(8.08,205.82) v3(8.08,204.55) v3(8.08,202.01) v3(8.08,200.74) v3(8.08,199.47) v3(8.08,198.2) v3(8.08,195.66) v3(8.08,194.39) v3(8.08,193.12) v3(8.08,191.85) v3(8.08,189.31) v3(8.08,188.04) v3(8.08,186.77) v3(8.08,185.5) v3(8.08,182.96) v3(8.08,181.69) v3(8.08,180.42) v3(8.08,179.15) v3(8.08,176.61) v3(8.08,175.34) v3(8.08,174.07) v3(8.08,172.8) v3(8.08,170.26) v3(8.08,168.99) v3(8.08,167.72) v3(8.08,166.45) v3(8.08,163.91) v3(8.08,162.64) v3(8.08,161.37) v3(8.08,160.1) v3(8.08,157.56) v3(8.08,92.79) v3(8.08,91.52) v3(8.08,90.25) v3(8.08,88.98) v3(8.08,86.44) v3(8.08,85.17) v3(8.08,83.9) v3(8.08,82.63) v3(8.08,80.09) v3(8.08,78.82) v3(8.08,77.55) v3(8.08,76.28) v3(8.08,73.74) v3(8.08,72.47) v3(8.08,71.2) v3(8.08,69.93) v3(8.08,67.39) v3(8.08,66.12) v3(8.08,64.85) v3(8.08,63.58) v3(8.08,61.04) v3(8.08,59.77) v3(8.08,58.5) v3(8.08,57.23) v3(8.08,54.69) v3(8.08,53.42) v3(8.08,52.15) v3(8.08,50.88) v3(8.08,48.34) v3(8.08,47.07) v3(8.08,45.8) v3(8.08,44.53) v3(8.08,41.99) v3(8.08,40.72) v3(8.08,38.18) v3(8.08,35.64) v3(8.08,33.1) v3(8.08,30.56) v3(8.53,125.17) v3(9.21,114.36) v3(9.35,218.52) v3(9.35,215.98) v3(9.35,213.44) v3(9.35,210.9) v3(9.35,208.36) v3(9.35,207.09) v3(9.35,205.82) v3(9.35,204.55) v3(9.35,203.28) v3(9.35,202.01) v3(9.35,200.74) v3(9.35,199.47) v3(9.35,198.2) v3(9.35,196.93) v3(9.35,195.66) v3(9.35,194.39) v3(9.35,193.12) v3(9.35,191.85) v3(9.35,190.58) v3(9.35,189.31) v3(9.35,188.04) v3(9.35,186.77) v3(9.35,185.5) v3(9.35,184.23) v3(9.35,182.96) v3(9.35,181.69) v3(9.35,180.42) v3(9.35,179.15) v3(9.35,177.88) v3(9.35,176.61) v3(9.35,175.34) v3(9.35,174.07) v3(9.35,172.8) v3(9.35,171.53) v3(9.35,170.26) v3(9.35,168.99) v3(9.35,167.72) v3(9.35,166.45) v3(9.35,165.18) v3(9.35,163.91) v3(9.35,162.64) v3(9.35,161.37) v3(9.35,160.1) v3(9.35,158.83) v3(9.35,157.56) v3(9.35,92.79) v3(9.35,91.52) v3(9.35,90.25) v3(9.35,88.98) v3(9.35,87.71) v3(9.35,86.44) v3(9.35,85.17) v3(9.35,83.9) v3(9.35,82.63) v3(9.35,81.36) v3(9.35,80.09) v3(9.35,78.82) v3(9.35,77.55) v3(9.35,76.28) v3(9.35,75.01) v3(9.35,73.74) v3(9.35,72.47) v3(9.35,71.2) v3(9.35,69.93) v3(9.35,68.66) v3(9.35,67.39) v3(9.35,66.12) v3(9.35,64.85) v3(9.35,63.58) v3(9.35,62.31) v3(9.35,61.04) v3(9.35,59.77) v3(9.35,58.5) v3(9.35,57.23) v3(9.35,55.96) v3(9.35,54.69) v3(9.35,53.42) v3(9.35,52.15) v3(9.35,50.88) v3(9.35,49.61) v3(9.35,48.34) v3(9.35,47.07) v3(9.35,45.8) v3(9.35,44.53) v3(9.35,43.26) v3(9.35,41.99) v3(9.35,39.45) v3(9.35,36.91) v3(9.35,34.37) v3(9.35,31.83) v3(9.59,112.44) v3(9.81,127.09) v3(9.96,29) v3(10.53,125.17) v3(10.62,219.79) v3(10.62,217.25) v3(10.62,214.71) v3(10.62,212.17) v3(10.62,209.63) v3(10.62,208.36) v3(10.62,207.09) v3(10.62,205.82) v3(10.62,204.55) v3(10.62,203.28) v3(10.62,202.01) v3(10.62,200.74) v3(10.62,199.47) v3(10.62,198.2) v3(10.62,196.93) v3(10.62,195.66) v3(10.62,194.39) v3(10.62,193.12) v3(10.62,191.85) v3(10.62,190.58) v3(10.62,189.31) v3(10.62,188.04) v3(10.62,186.77) v3(10.62,185.5) v3(10.62,184.23) v3(10.62,182.96) v3(10.62,181.69) v3(10.62,180.42) v3(10.62,179.15) v3(10.62,177.88) v3(10.62,176.61) v3(10.62,175.34) v3(10.62,174.07) v3(10.62,172.8) v3(10.62,171.53) v3(10.62,170.26) v3(10.62,168.99) v3(10.62,167.72) v3(10.62,166.45) v3(10.62,165.18) v3(10.62,163.91) v3(10.62,162.64) v3(10.62,161.37) v3(10.62,160.1) v3(10.62,158.83) v3(10.62,157.56) v3(10.62,92.79) v3(10.62,91.52) v3(10.62,90.25) v3(10.62,88.98) v3(10.62,87.71) v3(10.62,86.44) v3(10.62,85.17) v3(10.62,83.9) v3(10.62,82.63) v3(10.62,81.36) v3(10.62,80.09) v3(10.62,78.82) v3(10.62,77.55) v3(10.62,76.28) v3(10.62,75.01) v3(10.62,73.74) v3(10.62,72.47) v3(10.62,71.2) v3(10.62,69.93) v3(10.62,68.66) v3(10.62,67.39) v3(10.62,66.12) v3(10.62,64.85) v3(10.62,63.58) v3(10.62,62.31) v3(10.62,61.04) v3(10.62,59.77) v3(10.62,58.5) v3(10.62,57.23) v3(10.62,55.96) v3(10.62,54.69) v3(10.62,53.42) v3(10.62,52.15) v3(10.62,50.88) v3(10.62,49.61) v3(10.62,48.34) v3(10.62,47.07) v3(10.62,45.8) v3(10.62,44.53) v3(10.62,43.26) v3(10.62,41.99) v3(10.62,40.72) v3(10.62,38.18) v3(10.62,35.64) v3(10.62,33.1) v3(10.62,30.56) v3(11.21,114.36) v3(11.59,112.44) v3(11.81,127.09) v3(11.89,218.52) v3(11.89,215.98) v3(11.89,213.44) v3(11.89,210.9) v3(11.89,208.36) v3(11.89,205.82) v3(11.89,204.55) v3(11.89,203.28) v3(11.89,202.01) v3(11.89,199.47) v3(11.89,198.2) v3(11.89,196.93) v3(11.89,195.66) v3(11.89,193.12) v3(11.89,191.85) v3(11.89,190.58) v3(11.89,189.31) v3(11.89,186.77) v3(11.89,185.5) v3(11.89,184.23) v3(11.89,182.96) v3(11.89,180.42) v3(11.89,179.15) v3(11.89,177.88) v3(11.89,176.61) v3(11.89,174.07) v3(11.89,172.8) v3(11.89,171.53) v3(11.89,170.26) v3(11.89,167.72) v3(11.89,166.45) v3(11.89,165.18) v3(11.89,163.91) v3(11.89,161.37) v3(11.89,160.1) v3(11.89,158.83) v3(11.89,157.56) v3(11.89,92.79) v3(11.89,90.25) v3(11.89,88.98) v3(11.89,87.71) v3(11.89,86.44) v3(11.89,83.9) v3(11.89,82.63) v3(11.89,81.36) v3(11.89,80.09) v3(11.89,77.55) v3(11.89,76.28) v3(11.89,75.01) v3(11.89,73.74) v3(11.89,71.2) v3(11.89,69.93) v3(11.89,68.66) v3(11.89,67.39) v3(11.89,64.85) v3(11.89,63.58) v3(11.89,62.31) v3(11.89,61.04) v3(11.89,58.5) v3(11.89,57.23) v3(11.89,55.96) v3(11.89,54.69) v3(11.89,52.15) v3(11.89,50.88) v3(11.89,49.61) v3(11.89,48.34) v3(11.89,45.8) v3(11.89,44.53) v3(11.89,43.26) v3(11.89,41.99) v3(11.89,39.45) v3(11.89,36.91) v3(11.89,34.37) v3(11.89,31.83) v3(12.52,221.11) v3(12.53,125.17) v3(13.16,219.79) v3(13.16,217.25) v3(13.16,214.71) v3(13.16,212.17) v3(13.16,209.63) v3(13.16,208.36) v3(13.16,205.82) v3(13.16,204.55) v3(13.16,203.28) v3(13.16,202.01) v3(13.16,199.47) v3(13.16,198.2) v3(13.16,196.93) v3(13.16,195.66) v3(13.16,193.12) v3(13.16,191.85) v3(13.16,190.58) v3(13.16,189.31) v3(13.16,186.77) v3(13.16,185.5) v3(13.16,184.23) v3(13.16,182.96) v3(13.16,180.42) v3(13.16,179.15) v3(13.16,177.88) v3(13.16,176.61) v3(13.16,174.07) v3(13.16,172.8) v3(13.16,171.53) v3(13.16,170.26) v3(13.16,167.72) v3(13.16,166.45) v3(13.16,165.18) v3(13.16,163.91) v3(13.16,161.37) v3(13.16,160.1) v3(13.16,158.83) v3(13.16,157.56) v3(13.21,114.36) v3(13.16,92.79) v3(13.16,90.25) v3(13.16,88.98) v3(13.16,87.71) v3(13.16,86.44) v3(13.16,83.9) v3(13.16,82.63) v3(13.16,81.36) v3(13.16,80.09) v3(13.16,77.55) v3(13.16,76.28) v3(13.16,75.01) v3(13.16,73.74) v3(13.16,71.2) v3(13.16,69.93) v3(13.16,68.66) v3(13.16,67.39) v3(13.16,64.85) v3(13.16,63.58) v3(13.16,62.31) v3(13.16,61.04) v3(13.16,58.5) v3(13.16,57.23) v3(13.16,55.96) v3(13.16,54.69) v3(13.16,52.15) v3(13.16,50.88) v3(13.16,49.61) v3(13.16,48.34) v3(13.16,45.8) v3(13.16,44.53) v3(13.16,43.26) v3(13.16,41.99) v3(13.16,40.72) v3(13.16,38.18) v3(13.16,35.64) v3(13.16,33.1) v3(13.16,30.56) v3(13.59,112.44) v3(13.66,123.52) v3(13.66,121.52) v3(13.66,119.52) v3(13.81,127.09) v3(14.43,218.52) v3(14.43,215.98) v3(14.43,213.44) v3(14.43,210.9) v3(14.43,208.36) v3(14.43,207.09) v3(14.43,205.82) v3(14.43,204.55) v3(14.43,203.28) v3(14.43,202.01) v3(14.43,200.74) v3(14.43,199.47) v3(14.43,198.2) v3(14.43,196.93) v3(14.43,195.66) v3(14.43,194.39) v3(14.43,193.12) v3(14.43,191.85) v3(14.43,190.58) v3(14.43,189.31) v3(14.43,188.04) v3(14.43,186.77) v3(14.43,185.5) v3(14.43,184.23) v3(14.43,182.96) v3(14.43,181.69) v3(14.43,180.42) v3(14.43,179.15) v3(14.43,177.88) v3(14.43,176.61) v3(14.43,175.34) v3(14.43,174.07) v3(14.43,172.8) v3(14.43,171.53) v3(14.43,170.26) v3(14.43,168.99) v3(14.43,167.72) v3(14.43,166.45) v3(14.43,165.18) v3(14.43,163.91) v3(14.43,162.64) v3(14.43,161.37) v3(14.43,160.1) v3(14.43,158.83) v3(14.43,157.56) v3(14.43,92.79) v3(14.43,91.52) v3(14.43,90.25) v3(14.43,88.98) v3(14.43,87.71) v3(14.43,86.44) v3(14.43,85.17) v3(14.43,83.9) v3(14.43,82.63) v3(14.43,81.36) v3(14.43,80.09) v3(14.43,78.82) v3(14.43,77.55) v3(14.43,76.28) v3(14.43,75.01) v3(14.43,73.74) v3(14.43,72.47) v3(14.43,71.2) v3(14.43,69.93) v3(14.43,68.66) v3(14.43,67.39) v3(14.43,66.12) v3(14.43,64.85) v3(14.43,63.58) v3(14.43,62.31) v3(14.43,61.04) v3(14.43,59.77) v3(14.43,58.5) v3(14.43,57.23) v3(14.43,55.96) v3(14.43,54.69) v3(14.43,53.42) v3(14.43,52.15) v3(14.43,50.88) v3(14.43,49.61) v3(14.43,48.34) v3(14.43,47.07) v3(14.43,45.8) v3(14.43,44.53) v3(14.43,43.26) v3(14.43,41.99) v3(14.43,39.45) v3(14.43,36.91) v3(14.43,34.37) v3(14.43,31.83) v3(15.21,114.36) v3(15.57,214.69) v3(15.59,125.17) v3(15.58,123.99) v3(15.58,121.99) v3(15.58,119.99) v3(15.59,112.44) v3(15.63,54.39) v3(15.69,88.73) v3(15.68,86.75) v3(15.7,84.16) v3(15.68,80.4) v3(15.68,74.05) v3(15.68,67.7) v3(15.68,67.1) v3(15.7,63.31) v3(15.68,61.35) v3(15.68,55) v3(15.72,50.61) v3(15.68,48.65) v3(15.75,41.51) v3(15.81,127.09) v3(15.8,79.79) v3(15.78,77.83) v3(15.75,65.15) v3(15.91,92.49) v3(15.85,86.14) v3(15.89,73.43) v3(16.04,75.97) v3(16.12,56.95) v3(16.09,39.54) v3(16.29,218.63) v3(16.27,82.32) v3(16.26,47.92) v3(16.41,45.68) v3(16.55,90.31) v3(16.51,69.62) v3(16.65,83.67) v3(16.56,52.22) v3(16.69,71.1) v3(16.75,58.79) v3(16.76,34.92) v3(17.21,114.36) v3(17.3,92.74) v3(17.32,65.16) v3(17.44,67.08) v3(17.37,61.26) v3(17.35,54.05) v3(17.48,38.1) v3(17.59,125.17) v3(17.59,112.44) v3(17.63,87.23) v3(17.64,61.76) v3(17.61,42.35) v3(17.69,85.36) v3(17.68,80.62) v3(17.7,79.18) v3(17.68,74.05) v3(17.68,67.7) v3(17.81,127.09) v3(17.76,72.72) v3(17.83,44.27) v3(17.84,40.36) v3(18.04,76) v3(17.97,50.81) v3(18.12,49.6) v3(18.18,56.22) v3(18.42,64.3) v3(18.45,59.47) v3(18.5,88.76) v3(18.51,69.62) v3(18.51,47.64) v3(18.61,123.47) v3(18.61,121.47) v3(18.61,119.47) v3(18.58,91.14) v3(18.62,70.58) v3(19.05,45.71) v3(19.08,93.66) v3(19.14,79.67) v3(19.11,78.18) v3(19.21,114.36) v3(19.25,81.76) v3(19.32,65.16) v3(19.34,61.58) v3(19.27,54.54) v3(19.3,52.54) v3(19.25,42.87) v3(19.45,84.67) v3(19.44,67.07) v3(19.39,49.4) v3(19.42,37.62) v3(19.59,112.44) v3(19.59,74.64) v3(19.57,62.29) v3(19.7,87.7) v3(19.7,86.68) v3(19.68,67.7) v3(19.66,39.54) v3(19.81,127.09) v3(19.75,72.56) v3(20.15,59.65) v3(20.33,81.66) v3(20.37,91.76) v3(20.4,64.05) v3(20.42,51.09) v3(20.53,123.83) v3(20.53,121.83) v3(20.53,119.83) v3(20.51,69.62) v3(20.61,70.81) v3(20.84,90.37) v3(20.85,88.47) v3(20.85,76.2) v3(20.99,61.49) v3(20.96,45.14) v3(21.08,93.68) v3(21.06,78.19) v3(21.21,114.36) v3(21.19,83.83) v3(21.23,64.55) v3(21.2,42.42) v3(21.26,73.88) v3(21.35,66.47) v3(21.42,37.62) v3(21.46,85.01) v3(21.59,125.17) v3(21.59,112.44) v3(21.57,48.17) v3(21.68,67.7) v3(21.66,39.54) v3(21.81,127.09) v3(21.81,58.53) v3(21.91,79.99) v3(22.14,63.06) v3(22.18,71.84) v3(22.21,70.67) v3(22.28,91.15) v3(22.32,81.91) v3(22.3,56.6) v3(22.53,50.93) v3(22.75,75.21) v3(22.71,45.43) v3(22.75,115.06) v3(22.83,88.47) v3(22.82,76.23) v3(23.03,116.89) v3(23,93.13) v3(23.03,90.38) v3(23.09,86.17) v3(23.11,83.83) v3(23.09,43.08) v3(23.09,40.94) v3(23.23,64.55) v3(23.24,55.78) v3(23.35,66.47) v3(23.36,61.47) v3(23.41,37.75) v3(23.54,68.41) v3(23.47,49.12) v3(23.59,112.44) v3(23.59,78.8) v3(23.65,124.32) v3(23.65,122.32) v3(23.65,120.32) v3(23.8,58.41) v3(23.85,59.54) v3(24.05,80.91) v3(24.01,57.54) v3(24.03,52.26) v3(24.05,84.42) v3(24.05,81.91) v3(24.13,72.3) v3(24.13,70.3) v3(24.13,46.84) v3(24.24,127.09) v3(24.17,114.4) v3(24.42,91.72) v3(24.4,43.94) v3(24.49,42.37) v3(24.59,116.28) v3(24.63,77.08) v3(24.7,88.46) v3(24.72,75.52) v3(24.8,39.19) v3(24.94,114.4) v3(25,87.23) v3(24.96,48.33) v3(25.23,64.55) v3(25.23,55.57) v3(25.35,66.47) v3(25.54,73.6) v3(25.57,123.51) v3(25.57,121.51) v3(25.57,119.51) v3(25.59,112.44) v3(25.57,45.57) v3(25.69,87.75) v3(25.77,82.94) v3(26.01,125.17) v3(25.98,116.97) v3(26.01,90.52) v3(26.01,85.51) v3(26.01,80.54) v3(26.01,57.5) v3(26.01,52.5) v3(26.02,47.5) v3(26.24,127.09) v3(26.33,115.06) v3(27.22,64.44) v3(27.34,66.37) v3(27.59,112.44) v3(28.01,125.17) v3(28.05,114.36) v3(28.24,127.09) v3(28.65,123.92) v3(28.65,121.92) v3(28.65,119.92) v3(28.68,85.92) v3(29.05,63.63) v3(29.25,65.75) v3(29.21,52.5) v3(29.4,88.6) v3(29.5,74.03) v3(29.59,112.44) v3(29.59,90.62) v3(29.59,84.11) v3(29.58,57.5) v3(29.87,79.4) v3(30.05,114.36) v3(30.03,55.53) v3(30.02,47.48) v3(30.1,92.5) v3(30.1,87.34) v3(30.1,82.34) v3(30.1,77.34) v3(30.22,50.27) v3(30.18,45.48) v3(30.34,62.1) v3(30.57,123.51) v3(30.57,121.51) v3(30.57,119.51) v3(30.84,127.09) v3(30.91,75.44) v3(30.88,64.61) v3(30.88,60.17) v3(31,85.53) v3(31.14,51.97) v3(31.29,80.81) v3(31.43,89.96) v3(31.48,93.89) v3(31.51,88.75) v3(31.51,83.75) v3(31.51,78.75) v3(31.49,56.92) v3(31.59,112.44) v3(31.7,54.44) v3(31.83,46.63) v3(31.89,44.44) v3(32.01,125.17) v3(32.05,114.36) v3(32.02,91.77) v3(31.98,49.32) v3(32.1,63.02) v3(32.33,76.85) v3(32.42,86.94) v3(32.7,82.23) v3(32.68,59.3) v3(32.84,127.09) v3(33,61.23) v3(33,51.23) v3(33.59,112.44) v3(34.01,125.17) v3(34.05,114.36) v3(34.84,127.09) v3(35.59,112.44) v3(36.01,125.17) v3(36.05,114.36) v3(36.84,127.09) v3(37.59,112.44) v3(38.03,114.64) v3(38.11,124.65) v3(38.62,122.55) v3(38.62,120.55) v3(38.62,118.55) v3(38.62,116.55) v3(38.93,126.55) v3(39.7,112.93) v3(40.28,125.09) v3(40.54,122.93) v3(40.54,120.93) v3(40.54,118.93) v3(40.54,116.93) v3(40.54,114.93) v4(5.54,208.99) v4(5.54,207.72) v4(5.54,206.45) v4(5.54,205.18) v4(5.54,203.91) v4(5.54,202.64) v4(5.54,201.37) v4(5.54,200.1) v4(5.54,198.83) v4(5.54,197.56) v4(5.54,196.29) v4(5.54,195.02) v4(5.54,193.75) v4(5.54,192.48) v4(5.54,191.21) v4(5.54,189.94) v4(5.54,188.67) v4(5.54,187.4) v4(5.54,186.13) v4(5.54,184.86) v4(5.54,183.59) v4(5.54,182.32) v4(5.54,181.05) v4(5.54,179.78) v4(5.54,178.51) v4(5.54,177.24) v4(5.54,175.97) v4(5.54,174.7) v4(5.54,173.43) v4(5.54,172.16) v4(5.54,170.89) v4(5.54,169.62) v4(5.54,168.35) v4(5.54,167.08) v4(5.54,165.81) v4(5.54,164.54) v4(5.54,163.27) v4(5.54,162) v4(5.54,160.73) v4(5.54,159.46) v4(5.54,158.19) v4(5.54,92.15) v4(5.54,90.88) v4(5.54,89.61) v4(5.54,88.34) v4(5.54,87.07) v4(5.54,85.8) v4(5.54,84.53) v4(5.54,83.26) v4(5.54,81.99) v4(5.54,80.72) v4(5.54,79.45) v4(5.54,78.18) v4(5.54,76.91) v4(5.54,75.64) v4(5.54,74.37) v4(5.54,73.1) v4(5.54,71.83) v4(5.54,70.56) v4(5.54,69.29) v4(5.54,68.02) v4(5.54,66.75) v4(5.54,65.48) v4(5.54,64.21) v4(5.54,62.94) v4(5.54,61.67) v4(5.54,60.4) v4(5.54,59.13) v4(5.54,57.86) v4(5.54,56.59) v4(5.54,55.32) v4(5.54,54.05) v4(5.54,52.78) v4(5.54,51.51) v4(5.54,50.24) v4(5.54,48.97) v4(5.54,47.7) v4(5.54,46.43) v4(5.54,45.16) v4(5.54,43.89) v4(5.54,42.62) v4(6.17,208.99) v4(6.17,208.36) v4(6.17,207.72) v4(6.17,207.09) v4(6.17,206.45) v4(6.17,205.82) v4(6.17,205.18) v4(6.17,204.55) v4(6.17,203.91) v4(6.17,202.64) v4(6.17,202.01) v4(6.17,201.37) v4(6.17,200.74) v4(6.17,200.1) v4(6.17,199.47) v4(6.17,198.83) v4(6.17,198.2) v4(6.17,197.56) v4(6.17,196.29) v4(6.17,195.66) v4(6.17,195.02) v4(6.17,194.39) v4(6.17,193.75) v4(6.17,193.12) v4(6.17,192.48) v4(6.17,191.85) v4(6.17,191.21) v4(6.17,189.94) v4(6.17,189.31) v4(6.17,188.67) v4(6.17,188.04) v4(6.17,187.4) v4(6.17,186.77) v4(6.17,186.13) v4(6.17,185.5) v4(6.17,184.86) v4(6.17,183.59) v4(6.17,182.96) v4(6.17,182.32) v4(6.17,181.69) v4(6.17,181.05) v4(6.17,180.42) v4(6.17,179.78) v4(6.17,179.15) v4(6.17,178.51) v4(6.17,177.24) v4(6.17,176.61) v4(6.17,175.97) v4(6.17,175.34) v4(6.17,174.7) v4(6.17,174.07) v4(6.17,173.43) v4(6.17,172.8) v4(6.17,172.16) v4(6.17,170.89) v4(6.17,170.26) v4(6.17,169.62) v4(6.17,168.99) v4(6.17,168.35) v4(6.17,167.72) v4(6.17,167.08) v4(6.17,166.45) v4(6.17,165.81) v4(6.17,164.54) v4(6.17,163.91) v4(6.17,163.27) v4(6.17,162.64) v4(6.17,162) v4(6.17,161.37) v4(6.17,160.73) v4(6.17,160.1) v4(6.17,159.46) v4(6.17,158.19) v4(6.17,157.56) v4(6.17,92.79) v4(6.17,92.15) v4(6.17,91.52) v4(6.17,90.88) v4(6.17,90.25) v4(6.17,89.61) v4(6.17,88.98) v4(6.17,88.34) v4(6.17,87.07) v4(6.17,86.44) v4(6.17,85.8) v4(6.17,85.17) v4(6.17,84.53) v4(6.17,83.9) v4(6.17,83.26) v4(6.17,82.63) v4(6.17,81.99) v4(6.17,80.72) v4(6.17,80.09) v4(6.17,79.45) v4(6.17,78.82) v4(6.17,78.18) v4(6.17,77.55) v4(6.17,76.91) v4(6.17,76.28) v4(6.17,75.64) v4(6.17,74.37) v4(6.17,73.74) v4(6.17,73.1) v4(6.17,72.47) v4(6.17,71.83) v4(6.17,71.2) v4(6.17,70.56) v4(6.17,69.93) v4(6.17,69.29) v4(6.17,68.02) v4(6.17,67.39) v4(6.17,66.75) v4(6.17,66.12) v4(6.17,65.48) v4(6.17,64.85) v4(6.17,64.21) v4(6.17,63.58) v4(6.17,62.94) v4(6.17,61.67) v4(6.17,61.04) v4(6.17,60.4) v4(6.17,59.77) v4(6.17,59.13) v4(6.17,58.5) v4(6.17,57.86) v4(6.17,57.23) v4(6.17,56.59) v4(6.17,55.32) v4(6.17,54.69) v4(6.17,54.05) v4(6.17,53.42) v4(6.17,52.78) v4(6.17,52.15) v4(6.17,51.51) v4(6.17,50.88) v4(6.17,50.24) v4(6.17,48.97) v4(6.17,48.34) v4(6.17,47.7) v4(6.17,47.07) v4(6.17,46.43) v4(6.17,45.8) v4(6.17,45.16) v4(6.17,44.53) v4(6.17,43.89) v4(6.17,42.62) v4(6.17,41.99) v4(6.81,207.72) v4(6.81,206.45) v4(6.81,205.18) v4(6.81,201.37) v4(6.81,200.1) v4(6.81,198.83) v4(6.81,195.02) v4(6.81,193.75) v4(6.81,192.48) v4(6.81,188.67) v4(6.81,187.4) v4(6.81,186.13) v4(6.81,182.32) v4(6.81,181.05) v4(6.81,179.78) v4(6.81,175.97) v4(6.81,174.7) v4(6.81,173.43) v4(6.81,169.62) v4(6.81,168.35) v4(6.81,167.08) v4(6.81,163.27) v4(6.81,162) v4(6.81,160.73) v4(6.81,92.15) v4(6.81,90.88) v4(6.81,89.61) v4(6.81,85.8) v4(6.81,84.53) v4(6.81,83.26) v4(6.81,79.45) v4(6.81,78.18) v4(6.81,76.91) v4(6.81,73.1) v4(6.81,71.83) v4(6.81,70.56) v4(6.81,66.75) v4(6.81,65.48) v4(6.81,64.21) v4(6.81,60.4) v4(6.81,59.13) v4(6.81,57.86) v4(6.81,54.05) v4(6.81,52.78) v4(6.81,51.51) v4(6.81,47.7) v4(6.81,46.43) v4(6.81,45.16) v4(7.44,208.99) v4(7.44,208.36) v4(7.44,207.72) v4(7.44,207.09) v4(7.44,206.45) v4(7.44,205.82) v4(7.44,205.18) v4(7.44,204.55) v4(7.44,202.01) v4(7.44,201.37) v4(7.44,200.74) v4(7.44,200.1) v4(7.44,199.47) v4(7.44,198.83) v4(7.44,198.2) v4(7.44,195.66) v4(7.44,195.02) v4(7.44,194.39) v4(7.44,193.75) v4(7.44,193.12) v4(7.44,192.48) v4(7.44,191.85) v4(7.44,189.31) v4(7.44,188.67) v4(7.44,188.04) v4(7.44,187.4) v4(7.44,186.77) v4(7.44,186.13) v4(7.44,185.5) v4(7.44,182.96) v4(7.44,182.32) v4(7.44,181.69) v4(7.44,181.05) v4(7.44,180.42) v4(7.44,179.78) v4(7.44,179.15) v4(7.44,176.61) v4(7.44,175.97) v4(7.44,175.34) v4(7.44,174.7) v4(7.44,174.07) v4(7.44,173.43) v4(7.44,172.8) v4(7.44,170.26) v4(7.44,169.62) v4(7.44,168.99) v4(7.44,168.35) v4(7.44,167.72) v4(7.44,167.08) v4(7.44,166.45) v4(7.44,163.91) v4(7.44,163.27) v4(7.44,162.64) v4(7.44,162) v4(7.44,161.37) v4(7.44,160.73) v4(7.44,160.1) v4(7.44,157.56) v4(7.44,92.79) v4(7.44,92.15) v4(7.44,91.52) v4(7.44,90.88) v4(7.44,90.25) v4(7.44,89.61) v4(7.44,88.98) v4(7.44,86.44) v4(7.44,85.8) v4(7.44,85.17) v4(7.44,84.53) v4(7.44,83.9) v4(7.44,83.26) v4(7.44,82.63) v4(7.44,80.09) v4(7.44,79.45) v4(7.44,78.82) v4(7.44,78.18) v4(7.44,77.55) v4(7.44,76.91) v4(7.44,76.28) v4(7.44,73.74) v4(7.44,73.1) v4(7.44,72.47) v4(7.44,71.83) v4(7.44,71.2) v4(7.44,70.56) v4(7.44,69.93) v4(7.44,67.39) v4(7.44,66.75) v4(7.44,66.12) v4(7.44,65.48) v4(7.44,64.85) v4(7.44,64.21) v4(7.44,63.58) v4(7.44,61.04) v4(7.44,60.4) v4(7.44,59.77) v4(7.44,59.13) v4(7.44,58.5) v4(7.44,57.86) v4(7.44,57.23) v4(7.44,54.69) v4(7.44,54.05) v4(7.44,53.42) v4(7.44,52.78) v4(7.44,52.15) v4(7.44,51.51) v4(7.44,50.88) v4(7.44,48.34) v4(7.44,47.7) v4(7.44,47.07) v4(7.44,46.43) v4(7.44,45.8) v4(7.44,45.16) v4(7.44,44.53) v4(7.44,41.99) v4(8.08,208.99) v4(8.08,207.72) v4(8.08,206.45) v4(8.08,205.18) v4(8.08,201.37) v4(8.08,200.1) v4(8.08,198.83) v4(8.08,195.02) v4(8.08,193.75) v4(8.08,192.48) v4(8.08,188.67) v4(8.08,187.4) v4(8.08,186.13) v4(8.08,182.32) v4(8.08,181.05) v4(8.08,179.78) v4(8.08,175.97) v4(8.08,174.7) v4(8.08,173.43) v4(8.08,169.62) v4(8.08,168.35) v4(8.08,167.08) v4(8.08,163.27) v4(8.08,162) v4(8.08,160.73) v4(8.08,92.15) v4(8.08,90.88) v4(8.08,89.61) v4(8.08,85.8) v4(8.08,84.53) v4(8.08,83.26) v4(8.08,79.45) v4(8.08,78.18) v4(8.08,76.91) v4(8.08,73.1) v4(8.08,71.83) v4(8.08,70.56) v4(8.08,66.75) v4(8.08,65.48) v4(8.08,64.21) v4(8.08,60.4) v4(8.08,59.13) v4(8.08,57.86) v4(8.08,54.05) v4(8.08,52.78) v4(8.08,51.51) v4(8.08,47.7) v4(8.08,46.43) v4(8.08,45.16) v4(8.71,208.99) v4(8.71,208.36) v4(8.71,207.72) v4(8.71,207.09) v4(8.71,206.45) v4(8.71,205.82) v4(8.71,205.18) v4(8.71,204.55) v4(8.71,202.01) v4(8.71,201.37) v4(8.71,200.74) v4(8.71,200.1) v4(8.71,199.47) v4(8.71,198.83) v4(8.71,198.2) v4(8.71,195.66) v4(8.71,195.02) v4(8.71,194.39) v4(8.71,193.75) v4(8.71,193.12) v4(8.71,192.48) v4(8.71,191.85) v4(8.71,189.31) v4(8.71,188.67) v4(8.71,188.04) v4(8.71,187.4) v4(8.71,186.77) v4(8.71,186.13) v4(8.71,185.5) v4(8.71,182.96) v4(8.71,182.32) v4(8.71,181.69) v4(8.71,181.05) v4(8.71,180.42) v4(8.71,179.78) v4(8.71,179.15) v4(8.71,176.61) v4(8.71,175.97) v4(8.71,175.34) v4(8.71,174.7) v4(8.71,174.07) v4(8.71,173.43) v4(8.71,172.8) v4(8.71,170.26) v4(8.71,169.62) v4(8.71,168.99) v4(8.71,168.35) v4(8.71,167.72) v4(8.71,167.08) v4(8.71,166.45) v4(8.71,163.91) v4(8.71,163.27) v4(8.71,162.64) v4(8.71,162) v4(8.71,161.37) v4(8.71,160.73) v4(8.71,160.1) v4(8.71,157.56) v4(8.71,92.79) v4(8.71,92.15) v4(8.71,91.52) v4(8.71,90.88) v4(8.71,90.25) v4(8.71,89.61) v4(8.71,88.98) v4(8.71,86.44) v4(8.71,85.8) v4(8.71,85.17) v4(8.71,84.53) v4(8.71,83.9) v4(8.71,83.26) v4(8.71,82.63) v4(8.71,80.09) v4(8.71,79.45) v4(8.71,78.82) v4(8.71,78.18) v4(8.71,77.55) v4(8.71,76.91) v4(8.71,76.28) v4(8.71,73.74) v4(8.71,73.1) v4(8.71,72.47) v4(8.71,71.83) v4(8.71,71.2) v4(8.71,70.56) v4(8.71,69.93) v4(8.71,67.39) v4(8.71,66.75) v4(8.71,66.12) v4(8.71,65.48) v4(8.71,64.85) v4(8.71,64.21) v4(8.71,63.58) v4(8.71,61.04) v4(8.71,60.4) v4(8.71,59.77) v4(8.71,59.13) v4(8.71,58.5) v4(8.71,57.86) v4(8.71,57.23) v4(8.71,54.69) v4(8.71,54.05) v4(8.71,53.42) v4(8.71,52.78) v4(8.71,52.15) v4(8.71,51.51) v4(8.71,50.88) v4(8.71,48.34) v4(8.71,47.7) v4(8.71,47.07) v4(8.71,46.43) v4(8.71,45.8) v4(8.71,45.16) v4(8.71,44.53) v4(8.71,41.99) v4(9.35,207.72) v4(9.35,206.45) v4(9.35,205.18) v4(9.35,201.37) v4(9.35,200.1) v4(9.35,198.83) v4(9.35,195.02) v4(9.35,193.75) v4(9.35,192.48) v4(9.35,188.67) v4(9.35,187.4) v4(9.35,186.13) v4(9.35,182.32) v4(9.35,181.05) v4(9.35,179.78) v4(9.35,175.97) v4(9.35,174.7) v4(9.35,173.43) v4(9.35,169.62) v4(9.35,168.35) v4(9.35,167.08) v4(9.35,163.27) v4(9.35,162) v4(9.35,160.73) v4(9.35,92.15) v4(9.35,90.88) v4(9.35,89.61) v4(9.35,85.8) v4(9.35,84.53) v4(9.35,83.26) v4(9.35,79.45) v4(9.35,78.18) v4(9.35,76.91) v4(9.35,73.1) v4(9.35,71.83) v4(9.35,70.56) v4(9.35,66.75) v4(9.35,65.48) v4(9.35,64.21) v4(9.35,60.4) v4(9.35,59.13) v4(9.35,57.86) v4(9.35,54.05) v4(9.35,52.78) v4(9.35,51.51) v4(9.35,47.7) v4(9.35,46.43) v4(9.35,45.16) v4(9.98,208.99) v4(9.98,208.36) v4(9.98,207.72) v4(9.98,207.09) v4(9.98,206.45) v4(9.98,205.82) v4(9.98,205.18) v4(9.98,204.55) v4(9.98,202.01) v4(9.98,201.37) v4(9.98,200.74) v4(9.98,200.1) v4(9.98,199.47) v4(9.98,198.83) v4(9.98,198.2) v4(9.98,195.66) v4(9.98,195.02) v4(9.98,194.39) v4(9.98,193.75) v4(9.98,193.12) v4(9.98,192.48) v4(9.98,191.85) v4(9.98,189.31) v4(9.98,188.67) v4(9.98,188.04) v4(9.98,187.4) v4(9.98,186.77) v4(9.98,186.13) v4(9.98,185.5) v4(9.98,182.96) v4(9.98,182.32) v4(9.98,181.69) v4(9.98,181.05) v4(9.98,180.42) v4(9.98,179.78) v4(9.98,179.15) v4(9.98,176.61) v4(9.98,175.97) v4(9.98,175.34) v4(9.98,174.7) v4(9.98,174.07) v4(9.98,173.43) v4(9.98,172.8) v4(9.98,170.26) v4(9.98,169.62) v4(9.98,168.99) v4(9.98,168.35) v4(9.98,167.72) v4(9.98,167.08) v4(9.98,166.45) v4(9.98,163.91) v4(9.98,163.27) v4(9.98,162.64) v4(9.98,162) v4(9.98,161.37) v4(9.98,160.73) v4(9.98,160.1) v4(9.98,157.56) v4(9.98,92.79) v4(9.98,92.15) v4(9.98,91.52) v4(9.98,90.88) v4(9.98,90.25) v4(9.98,89.61) v4(9.98,88.98) v4(9.98,86.44) v4(9.98,85.8) v4(9.98,85.17) v4(9.98,84.53) v4(9.98,83.9) v4(9.98,83.26) v4(9.98,82.63) v4(9.98,80.09) v4(9.98,79.45) v4(9.98,78.82) v4(9.98,78.18) v4(9.98,77.55) v4(9.98,76.91) v4(9.98,76.28) v4(9.98,73.74) v4(9.98,73.1) v4(9.98,72.47) v4(9.98,71.83) v4(9.98,71.2) v4(9.98,70.56) v4(9.98,69.93) v4(9.98,67.39) v4(9.98,66.75) v4(9.98,66.12) v4(9.98,65.48) v4(9.98,64.85) v4(9.98,64.21) v4(9.98,63.58) v4(9.98,61.04) v4(9.98,60.4) v4(9.98,59.77) v4(9.98,59.13) v4(9.98,58.5) v4(9.98,57.86) v4(9.98,57.23) v4(9.98,54.69) v4(9.98,54.05) v4(9.98,53.42) v4(9.98,52.78) v4(9.98,52.15) v4(9.98,51.51) v4(9.98,50.88) v4(9.98,48.34) v4(9.98,47.7) v4(9.98,47.07) v4(9.98,46.43) v4(9.98,45.8) v4(9.98,45.16) v4(9.98,44.53) v4(9.98,41.99) v4(10.62,208.99) v4(10.62,207.72) v4(10.62,206.45) v4(10.62,205.18) v4(10.62,201.37) v4(10.62,200.1) v4(10.62,198.83) v4(10.62,195.02) v4(10.62,193.75) v4(10.62,192.48) v4(10.62,188.67) v4(10.62,187.4) v4(10.62,186.13) v4(10.62,182.32) v4(10.62,181.05) v4(10.62,179.78) v4(10.62,175.97) v4(10.62,174.7) v4(10.62,173.43) v4(10.62,169.62) v4(10.62,168.35) v4(10.62,167.08) v4(10.62,163.27) v4(10.62,162) v4(10.62,160.73) v4(10.62,92.15) v4(10.62,90.88) v4(10.62,89.61) v4(10.62,85.8) v4(10.62,84.53) v4(10.62,83.26) v4(10.62,79.45) v4(10.62,78.18) v4(10.62,76.91) v4(10.62,73.1) v4(10.62,71.83) v4(10.62,70.56) v4(10.62,66.75) v4(10.62,65.48) v4(10.62,64.21) v4(10.62,60.4) v4(10.62,59.13) v4(10.62,57.86) v4(10.62,54.05) v4(10.62,52.78) v4(10.62,51.51) v4(10.62,47.7) v4(10.62,46.43) v4(10.62,45.16) v4(11.25,208.99) v4(11.25,208.36) v4(11.25,207.72) v4(11.25,206.45) v4(11.25,205.82) v4(11.25,205.18) v4(11.25,204.55) v4(11.25,202.01) v4(11.25,201.37) v4(11.25,200.1) v4(11.25,199.47) v4(11.25,198.83) v4(11.25,198.2) v4(11.25,195.66) v4(11.25,195.02) v4(11.25,193.75) v4(11.25,193.12) v4(11.25,192.48) v4(11.25,191.85) v4(11.25,189.31) v4(11.25,188.67) v4(11.25,187.4) v4(11.25,186.77) v4(11.25,186.13) v4(11.25,185.5) v4(11.25,182.96) v4(11.25,182.32) v4(11.25,181.05) v4(11.25,180.42) v4(11.25,179.78) v4(11.25,179.15) v4(11.25,176.61) v4(11.25,175.97) v4(11.25,174.7) v4(11.25,174.07) v4(11.25,173.43) v4(11.25,172.8) v4(11.25,170.26) v4(11.25,169.62) v4(11.25,168.35) v4(11.25,167.72) v4(11.25,167.08) v4(11.25,166.45) v4(11.25,163.91) v4(11.25,163.27) v4(11.25,162) v4(11.25,161.37) v4(11.25,160.73) v4(11.25,160.1) v4(11.25,157.56) v4(11.25,92.79) v4(11.25,92.15) v4(11.25,90.88) v4(11.25,90.25) v4(11.25,89.61) v4(11.25,88.98) v4(11.25,86.44) v4(11.25,85.8) v4(11.25,84.53) v4(11.25,83.9) v4(11.25,83.26) v4(11.25,82.63) v4(11.25,80.09) v4(11.25,79.45) v4(11.25,78.18) v4(11.25,77.55) v4(11.25,76.91) v4(11.25,76.28) v4(11.25,73.74) v4(11.25,73.1) v4(11.25,71.83) v4(11.25,71.2) v4(11.25,70.56) v4(11.25,69.93) v4(11.25,67.39) v4(11.25,66.75) v4(11.25,65.48) v4(11.25,64.85) v4(11.25,64.21) v4(11.25,63.58) v4(11.25,61.04) v4(11.25,60.4) v4(11.25,59.13) v4(11.25,58.5) v4(11.25,57.86) v4(11.25,57.23) v4(11.25,54.69) v4(11.25,54.05) v4(11.25,52.78) v4(11.25,52.15) v4(11.25,51.51) v4(11.25,50.88) v4(11.25,48.34) v4(11.25,47.7) v4(11.25,46.43) v4(11.25,45.8) v4(11.25,45.16) v4(11.25,44.53) v4(11.25,41.99) v4(11.89,205.18) v4(11.89,198.83) v4(11.89,192.48) v4(11.89,186.13) v4(11.89,179.78) v4(11.89,173.43) v4(11.89,167.08) v4(11.89,160.73) v4(11.89,89.61) v4(11.89,83.26) v4(11.89,76.91) v4(11.89,70.56) v4(11.89,64.21) v4(11.89,57.86) v4(11.89,51.51) v4(11.89,45.16) v4(12.52,208.99) v4(12.52,208.36) v4(12.52,205.82) v4(12.52,205.18) v4(12.52,204.55) v4(12.52,202.01) v4(12.52,199.47) v4(12.52,198.83) v4(12.52,198.2) v4(12.52,195.66) v4(12.52,193.12) v4(12.52,192.48) v4(12.52,191.85) v4(12.52,189.31) v4(12.52,186.77) v4(12.52,186.13) v4(12.52,185.5) v4(12.52,182.96) v4(12.52,180.42) v4(12.52,179.78) v4(12.52,179.15) v4(12.52,176.61) v4(12.52,174.07) v4(12.52,173.43) v4(12.52,172.8) v4(12.52,170.26) v4(12.52,167.72) v4(12.52,167.08) v4(12.52,166.45) v4(12.52,163.91) v4(12.52,161.37) v4(12.52,160.73) v4(12.52,160.1) v4(12.52,157.56) v4(12.52,92.79) v4(12.52,90.25) v4(12.52,89.61) v4(12.52,88.98) v4(12.52,86.44) v4(12.52,83.9) v4(12.52,83.26) v4(12.52,82.63) v4(12.52,80.09) v4(12.52,77.55) v4(12.52,76.91) v4(12.52,76.28) v4(12.52,73.74) v4(12.52,71.2) v4(12.52,70.56) v4(12.52,69.93) v4(12.52,67.39) v4(12.52,64.85) v4(12.52,64.21) v4(12.52,63.58) v4(12.52,61.04) v4(12.52,58.5) v4(12.52,57.86) v4(12.52,57.23) v4(12.52,54.69) v4(12.52,52.15) v4(12.52,51.51) v4(12.52,50.88) v4(12.52,48.34) v4(12.52,45.8) v4(12.52,45.16) v4(12.52,44.53) v4(12.52,41.99) v4(13.16,208.99) v4(13.16,205.18) v4(13.16,198.83) v4(13.16,192.48) v4(13.16,186.13) v4(13.16,179.78) v4(13.16,173.43) v4(13.16,167.08) v4(13.16,160.73) v4(13.16,89.61) v4(13.16,83.26) v4(13.16,76.91) v4(13.16,70.56) v4(13.16,64.21) v4(13.16,57.86) v4(13.16,51.51) v4(13.16,45.16) v4(13.79,208.99) v4(13.79,208.36) v4(13.79,205.82) v4(13.79,205.18) v4(13.79,204.55) v4(13.79,202.01) v4(13.79,199.47) v4(13.79,198.83) v4(13.79,198.2) v4(13.79,195.66) v4(13.79,193.12) v4(13.79,192.48) v4(13.79,191.85) v4(13.79,189.31) v4(13.79,186.77) v4(13.79,186.13) v4(13.79,185.5) v4(13.79,182.96) v4(13.79,180.42) v4(13.79,179.78) v4(13.79,179.15) v4(13.79,176.61) v4(13.79,174.07) v4(13.79,173.43) v4(13.79,172.8) v4(13.79,170.26) v4(13.79,167.72) v4(13.79,167.08) v4(13.79,166.45) v4(13.79,163.91) v4(13.79,161.37) v4(13.79,160.73) v4(13.79,160.1) v4(13.79,157.56) v4(13.79,92.79) v4(13.79,90.25) v4(13.79,89.61) v4(13.79,88.98) v4(13.79,86.44) v4(13.79,83.9) v4(13.79,83.26) v4(13.79,82.63) v4(13.79,80.09) v4(13.79,77.55) v4(13.79,76.91) v4(13.79,76.28) v4(13.79,73.74) v4(13.79,71.2) v4(13.79,70.56) v4(13.79,69.93) v4(13.79,67.39) v4(13.79,64.85) v4(13.79,64.21) v4(13.79,63.58) v4(13.79,61.04) v4(13.79,58.5) v4(13.79,57.86) v4(13.79,57.23) v4(13.79,54.69) v4(13.79,52.15) v4(13.79,51.51) v4(13.79,50.88) v4(13.79,48.34) v4(13.79,45.8) v4(13.79,45.16) v4(13.79,44.53) v4(13.79,41.99) v4(14.43,205.18) v4(14.43,198.83) v4(14.43,192.48) v4(14.43,186.13) v4(14.43,179.78) v4(14.43,173.43) v4(14.43,167.08) v4(14.43,160.73) v4(14.43,89.61) v4(14.43,83.26) v4(14.43,76.91) v4(14.43,70.56) v4(14.43,64.21) v4(14.43,57.86) v4(14.43,51.51) v4(14.43,45.16) v4(15.06,208.99) v4(15.06,208.36) v4(15.06,205.82) v4(15.06,205.18) v4(15.06,204.55) v4(15.06,202.01) v4(15.06,199.47) v4(15.06,198.83) v4(15.06,198.2) v4(15.06,195.66) v4(15.06,193.12) v4(15.06,192.48) v4(15.06,191.85) v4(15.06,189.31) v4(15.06,186.77) v4(15.06,186.13) v4(15.06,185.5) v4(15.06,182.96) v4(15.06,180.42) v4(15.06,179.78) v4(15.06,179.15) v4(15.06,176.61) v4(15.06,174.07) v4(15.06,173.43) v4(15.06,172.8) v4(15.06,170.26) v4(15.06,167.72) v4(15.06,167.08) v4(15.06,166.45) v4(15.06,163.91) v4(15.06,161.37) v4(15.06,160.73) v4(15.06,160.1) v4(15.06,157.56) v4(15.06,92.79) v4(15.06,90.25) v4(15.06,89.61) v4(15.06,88.98) v4(15.06,86.44) v4(15.06,83.9) v4(15.06,83.26) v4(15.06,82.63) v4(15.06,80.09) v4(15.06,77.55) v4(15.06,76.91) v4(15.06,76.28) v4(15.06,73.74) v4(15.06,71.2) v4(15.06,70.56) v4(15.06,69.93) v4(15.06,67.39) v4(15.06,64.85) v4(15.06,64.21) v4(15.06,63.58) v4(15.06,61.04) v4(15.06,58.5) v4(15.06,57.86) v4(15.06,57.23) v4(15.06,54.69) v4(15.06,52.15) v4(15.06,51.51) v4(15.06,50.88) v4(15.06,48.34) v4(15.06,45.8) v4(15.06,45.16) v4(15.06,44.53) v4(15.06,41.99) v4(15.52,185.15) v4(15.63,196.01) v4(15.57,188.96) v4(15.64,44.2) v4(15.68,202.38) v4(15.71,199.82) v4(15.68,189.66) v4(15.68,176.96) v4(15.75,176.26) v4(15.68,170.61) v4(15.68,164.26) v4(15.75,157.13) v4(15.75,155.13) v4(15.76,206.23) v4(16.05,195.31) v4(15.97,191.5) v4(16.2,204.86) v4(16.23,187.12) v4(16.16,172.45) v4(16.22,153.19) v4(16.41,208.83) v4(16.49,202.34) v4(16.46,183.31) v4(16.81,193.47) v4(16.84,169.91) v4(16.77,166.11) v4(16.93,197.46) v4(16.85,179.83) v4(16.87,173.47) v4(17.2,182.08) v4(17.25,161.02) v4(17.31,168.07) v4(17.28,163.45) v4(17.32,159.02) v4(17.44,206.1) v4(17.47,207.27) v4(17.5,184.87) v4(17.5,177.79) v4(17.55,175.39) v4(17.5,158.16) v4(17.62,200.4) v4(17.59,156.17) v4(17.68,190.45) v4(17.68,170.61) v4(17.83,210.24) v4(17.93,181.95) v4(17.93,154.2) v4(18.02,195.61) v4(18.04,152.35) v4(18.16,172.45) v4(18.33,204.27) v4(18.33,202.27) v4(18.3,186.9) v4(18.39,193.45) v4(18.59,198.34) v4(18.59,196.34) v4(18.57,165.24) v4(18.69,200.34) v4(18.71,180.77) v4(18.66,157.53) v4(18.81,172.98) v4(18.84,169.91) v4(18.88,208.69) v4(18.85,207.52) v4(18.97,183.52) v4(18.97,178.81) v4(19.13,189.21) v4(19.09,167.15) v4(19.09,163.31) v4(19.09,161.31) v4(19.24,211.66) v4(19.2,193.11) v4(19.16,191.11) v4(19.15,165.15) v4(19.22,159.31) v4(19.47,174.82) v4(19.61,171.15) v4(19.69,205.74) v4(19.84,181.33) v4(19.93,154.2) v4(20.04,152.35) v4(20.07,201.78) v4(20.23,187.42) v4(20.34,194.75) v4(20.43,198.46) v4(20.43,196.46) v4(20.41,176.58) v4(20.45,163.64) v4(20.62,178.82) v4(20.55,173.18) v4(20.66,213.07) v4(20.7,180.66) v4(20.66,157.46) v4(20.88,210.72) v4(20.94,183.18) v4(21,191.27) v4(21,189.27) v4(21.07,160.08) v4(21.31,172.82) v4(21.42,193.22) v4(21.51,206.56) v4(21.54,155.38) v4(21.64,200.05) v4(21.71,211.52) v4(21.73,208.39) v4(21.84,181.33) v4(21.93,195.96) v4(22.03,152.52) v4(22.07,214.49) v4(22.07,201.9) v4(22.07,169.19) v4(22.1,157.5) v4(22.31,165.39) v4(22.45,188.52) v4(22.43,186.52) v4(22.43,184.52) v4(22.36,178.79) v4(22.42,171.16) v4(22.45,163.47) v4(22.47,167.23) v4(22.48,161.49) v4(22.69,180.88) v4(22.66,177.44) v4(22.66,175.44) v4(22.66,174.01) v4(22.81,208.91) v4(22.88,210.76) v4(23.12,212.93) v4(23.1,172.06) v4(23.16,194.2) v4(23.33,154.04) v4(23.38,190.29) v4(23.49,204.97) v4(23.53,199.38) v4(23.46,156.04) v4(23.7,182.06) v4(23.79,158.58) v4(23.93,196.05) v4(23.98,201.31) v4(23.97,168.03) v4(23.98,162.82) v4(23.97,158.03) v4(24.11,182.3) v4(24.11,164.58) v4(24.23,165.96) v4(24.27,187.97) v4(24.27,185.97) v4(24.27,183.97) v4(24.31,179.9) v4(24.36,171.24) v4(24.51,178.39) v4(24.51,176.39) v4(24.51,174.39) v4(24.53,160.43) v4(24.57,209.71) v4(24.89,207.73) v4(24.96,206.12) v4(24.96,173.03) v4(25.14,215.13) v4(25.09,213.29) v4(25.17,201.05) v4(25.16,194.2) v4(25.23,191.05) v4(25.34,204.2) v4(25.31,166.18) v4(25.34,161.18) v4(25.52,199.2) v4(25.45,156.18) v4(25.85,189.2) v4(25.93,196.05) v4(25.91,181.1) v4(25.97,206.05) v4(26.02,182.94) v4(25.97,168.03) v4(25.97,163.03) v4(25.97,158.03) v4(26.23,166) v4(26.38,161.18) v4(27.14,215.13) v4(27.09,213.29) v4(27.91,181.1) v4(28.02,182.94) v4(28.36,171.18) v4(28.77,204.2) v4(28.9,171.18) v4(28.9,163.03) v4(28.96,206.05) v4(29.03,196.05) v4(28.96,173.03) v4(29.04,168.03) v4(29.14,215.13) v4(29.09,213.29) v4(29.17,201.05) v4(29.34,194.2) v4(29.31,166.18) v4(29.81,211.42) v4(29.85,180.61) v4(29.85,178.61) v4(30.02,182.88) v4(30.11,199.2) v4(30.36,171.18) v4(30.38,161.18) v4(30.58,176.75) v4(30.77,204.2) v4(30.9,171.18) v4(30.9,163.03) v4(30.98,214.35) v4(30.96,206.05) v4(31.03,196.05) v4(30.96,173.03) v4(31.04,168.03) v4(31.09,209.88) v4(31.17,201.05) v4(31.34,194.2) v4(31.31,166.18) v4(31.5,212.42) v4(31.53,181.58) v4(31.7,179.58) v4(32.11,199.2) v4(32.36,171.18) v4(32.38,161.18) v4(32.5,176.18) v4(32.77,204.2) v4(32.9,171.18) v4(32.9,163.03) v4(32.96,211.05) v4(32.97,209.2) v4(32.96,206.05) v4(33.03,196.05) v4(32.96,178.03) v4(32.96,173.03) v4(33.04,168.03) v4(34.95,195.08) v4(40.64,12.06) v4(43.81,8.89) v4(48.72,134.91) v4(48.85,151.96) v4(49.22,135.56) v4(49.34,151.32) v4(49.47,54.37) v4(49.46,39.62) v4(49.59,197.31) v4(49.75,211.66) v4(49.71,136.2) v4(49.84,150.67) v4(49.8,134.04) v4(49.97,53.72) v4(49.96,40.27) v4(50.09,197.95) v4(50.24,211.01) v4(50.21,136.84) v4(50.33,150.03) v4(50.3,134.68) v4(50.45,152.16) v4(50.46,53.08) v4(50.46,40.91) v4(50.59,198.6) v4(50.57,55.21) v4(50.57,38.77) v4(50.74,210.37) v4(50.71,137.48) v4(50.83,149.38) v4(50.8,135.33) v4(50.95,196.79) v4(50.94,151.52) v4(50.91,115.14) v4(50.86,100.79) v4(50.96,52.43) v4(50.95,41.55) v4(51.1,212.18) v4(51.08,199.24) v4(51.07,54.57) v4(51.06,39.42) v4(51.24,209.73) v4(51.2,138.13) v4(51.32,148.74) v4(51.3,135.97) v4(51.44,197.43) v4(51.44,150.87) v4(51.41,114.49) v4(51.36,101.43) v4(51.45,51.79) v4(51.45,42.2) v4(51.6,211.54) v4(51.58,199.88) v4(51.56,53.93) v4(51.56,40.06) v4(51.73,209.08) v4(51.7,138.77) v4(51.82,148.09) v4(51.79,136.61) v4(51.77,50.71) v4(51.77,49.71) v4(51.77,48.71) v4(51.77,47.71) v4(51.77,46.71) v4(51.77,45.71) v4(51.77,44.71) v4(51.77,43.71) v4(51.94,198.07) v4(51.93,150.23) v4(51.91,113.85) v4(51.86,102.08) v4(51.95,51.14) v4(51.95,42.84) v4(52.09,210.89) v4(52.08,208.42) v4(52.08,200.52) v4(52.06,53.28) v4(52.06,40.7) v4(52.2,139.41) v4(52.22,100.27) v4(52.31,147.45) v4(52.29,137.26) v4(52.27,115.66) v4(52.44,198.71) v4(52.43,149.59) v4(52.4,113.21) v4(52.35,102.72) v4(52.44,50.5) v4(52.45,43.48) v4(52.59,210.25) v4(52.57,207.77) v4(52.57,201.17) v4(52.55,52.64) v4(52.55,41.34) v4(52.69,140.06) v4(52.71,100.91) v4(52.81,146.8) v4(52.79,137.9) v4(52.76,115.02) v4(52.9,206.57) v4(52.9,205.57) v4(52.9,204.57) v4(52.9,203.57) v4(52.9,202.57) v4(52.93,199.36) v4(52.92,148.94) v4(52.9,145.42) v4(52.9,144.42) v4(52.9,143.42) v4(52.9,142.42) v4(52.9,141.42) v4(52.85,112.54) v4(52.85,103.36) v4(52.94,49.85) v4(52.94,44.13) v4(53.05,51.99) v4(53.09,209.61) v4(53.07,207.13) v4(53.07,201.81) v4(53.05,41.99) v4(53.19,140.7) v4(53.21,101.55) v4(53.3,146.16) v4(53.28,138.54) v4(53.26,114.37) v4(53.35,111.9) v4(53.35,104) v4(53.43,208.94) v4(53.43,200) v4(53.42,148.3) v4(53.43,49.21) v4(53.44,44.77) v4(53.54,51.35) v4(53.55,42.63) v4(53.57,206.49) v4(53.57,202.45) v4(53.69,141.34) v4(53.71,102.19) v4(53.8,145.51) v4(53.78,139.19) v4(53.76,113.73) v4(53.84,111.25) v4(53.84,104.65) v4(53.77,52.21) v4(53.77,41.71) v4(53.9,209.57) v4(53.93,208.3) v4(53.93,200.64) v4(53.9,199.57) v4(53.91,147.65) v4(53.93,48.56) v4(53.94,45.41) v4(54,142.2) v4(54.04,50.7) v4(54.04,43.27) v4(54.07,205.84) v4(54.07,203.1) v4(54.05,144.71) v4(54.2,113.06) v4(54.17,110.05) v4(54.17,109.05) v4(54.17,108.05) v4(54.17,107.05) v4(54.17,106.05) v4(54.2,102.84) v4(54.28,139.83) v4(54.34,110.61) v4(54.34,105.29) v4(54.43,207.65) v4(54.43,201.29) v4(54.4,148.42) v4(54.41,147.01) v4(54.4,138.42) v4(54.42,47.92) v4(54.43,46.05) v4(54.53,50.06) v4(54.54,43.92) v4(54.56,205.2) v4(54.56,203.74) v4(54.75,204.47) v4(54.7,112.42) v4(54.7,103.48) v4(54.73,46.98) v4(54.77,140.47) v4(54.84,109.97) v4(54.84,105.93) v4(54.77,52.21) v4(54.77,41.71) v4(54.9,209.57) v4(54.92,207.01) v4(54.92,201.93) v4(54.9,199.57) v4(54.9,146.36) v4(54.87,144.41) v4(54.88,142.61) v4(55.03,49.41) v4(55.04,44.56) v4(55.17,140.81) v4(55.17,113.05) v4(55.2,111.78) v4(55.2,104.12) v4(55.17,103.05) v4(55.34,109.32) v4(55.34,106.58) v4(55.42,206.37) v4(55.42,202.57) v4(55.4,148.42) v4(55.36,144.4) v4(55.44,142.62) v4(55.4,138.42) v4(55.52,48.77) v4(55.54,45.2) v4(55.57,146.21) v4(55.65,205.89) v4(55.68,203.07) v4(55.7,111.13) v4(55.7,104.77) v4(55.83,108.68) v4(55.83,107.22) v4(55.77,52.21) v4(55.77,41.71) v4(55.9,209.57) v4(55.9,199.57) v4(55.9,140.83) v4(56.02,107.95) v4(56.1,144.24) v4(56.13,142.9) v4(56.17,113.05) v4(56.19,110.49) v4(56.19,105.41) v4(56.17,103.05) v4(56.22,48.6) v4(56.17,45.39) v4(56.28,143.52) v4(56.36,205.87) v4(56.36,203.07) v4(56.4,148.42) v4(56.4,138.42) v4(56.47,146.51) v4(56.48,140.51) v4(56.69,109.85) v4(56.69,106.05) v4(56.9,209.57) v4(56.9,199.57) v4(56.92,109.37) v4(56.95,106.55) v4(57.02,45.62) v4(57.15,203.35) v4(57.08,48.33) v4(57.2,205.59) v4(57.17,113.05) v4(57.17,103.05) v4(57.33,146.58) v4(57.33,140.45) v4(57.63,109.35) v4(57.63,106.55) v4(57.89,48.3) v4(57.88,45.69) v4(57.96,205.54) v4(57.96,203.4) v4(58.04,140.4) v4(58.07,146.62) v4(58.17,113.05) v4(58.17,103.05) v4(58.27,41.71) v4(58.42,205.23) v4(58.42,203.71) v4(58.42,106.83) v4(58.47,109.07) v4(58.74,146.62) v4(58.77,140.4) v4(58.77,52.21) v4(58.79,45.66) v4(58.9,209.57) v4(58.88,205.54) v4(58.9,203.38) v4(58.9,199.57) v4(58.9,148.42) v4(58.9,138.42) v4(58.9,48.3) v4(59.1,204.05) v4(59.23,109.02) v4(59.23,106.88) v4(59.27,41.71) v4(59.45,140.45) v4(59.46,146.57) v4(59.64,205.47) v4(59.69,108.71) v4(59.69,107.19) v4(59.68,45.83) v4(59.77,203.94) v4(59.77,52.21) v4(59.76,48.18) v4(59.9,209.57) v4(59.9,199.57) v4(59.9,148.42) v4(59.9,138.42) v4(59.91,46.49) v4(60.1,140.45) v4(60.15,109.02) v4(60.17,113.05) v4(60.17,106.86) v4(60.17,103.05) v4(60.26,146.53) v4(60.27,41.71) v4(60.45,205.47) v4(60.45,204.08) v4(60.51,143.45) v4(60.57,48.18) v4(60.57,46.79) v4(60.69,145.98) v4(60.69,144.21) v4(60.69,142.67) v4(60.69,141.83) v4(60.68,140.98) v4(60.77,52.21) v4(60.9,209.57) v4(60.9,199.57) v4(60.9,148.42) v4(60.9,138.42) v4(60.91,108.95) v4(61.04,107.42) v4(61.17,113.05) v4(61.17,103.05) v4(61.26,205.47) v4(61.26,204.08) v4(61.3,145.8) v4(61.3,144.42) v4(61.27,41.71) v4(61.38,48.18) v4(61.38,46.79) v4(61.72,108.95) v4(61.72,107.56) v4(61.77,52.21) v4(61.9,209.57) v4(61.9,199.57) v4(61.9,148.42) v4(61.9,138.42) v4(62.08,205.47) v4(62.08,204.08) v4(62.11,145.8) v4(62.11,144.4) v4(62.17,113.05) v4(62.17,103.05) v4(62.19,48.18) v4(62.19,46.79) v4(62.27,51.71) v4(62.27,50.71) v4(62.27,49.71) v4(62.27,48.71) v4(62.27,45.71) v4(62.27,44.71) v4(62.27,43.71) v4(62.27,42.71) v4(62.29,41.72) v4(62.53,108.95) v4(62.53,107.56) v4(62.9,209.57) v4(62.9,208.57) v4(62.9,207.57) v4(62.9,206.57) v4(62.89,205.47) v4(62.89,204.08) v4(62.9,203.57) v4(62.9,202.57) v4(62.9,201.57) v4(62.9,200.57) v4(62.9,199.57) v4(62.9,148.42) v4(62.9,147.42) v4(62.9,146.42) v4(62.92,145.8) v4(62.92,144.4) v4(62.9,143.42) v4(62.9,142.42) v4(62.9,141.42) v4(62.9,140.42) v4(62.9,139.42) v4(62.9,138.42) v4(63.01,48.18) v4(63.01,46.79) v4(63.17,113.05) v4(63.17,103.05) v4(63.35,108.95) v4(63.35,107.56) v4(63.7,205.47) v4(63.7,204.08) v4(63.73,145.8) v4(63.73,144.4) v4(63.82,48.18) v4(63.82,46.79) v4(64.07,24.98) v4(64.06,8.05) v4(64.17,113.05) v4(64.17,112.05) v4(64.17,111.05) v4(64.17,110.05) v4(64.16,108.95) v4(64.16,107.56) v4(64.17,107.05) v4(64.17,106.05) v4(64.17,105.05) v4(64.17,104.05) v4(64.17,103.05) v4(64.19,70.93) v4(64.29,85.34) v4(64.52,205.47) v4(64.52,204.08) v4(64.55,145.8) v4(64.55,144.4) v4(64.63,48.18) v4(64.63,46.79) v4(64.57,24.34) v4(64.56,8.69) v4(64.71,182) v4(64.72,167.27) v4(64.68,71.57) v4(64.76,84.7) v4(64.97,108.95) v4(64.97,107.56) v4(65.06,23.69) v4(65.06,9.33) v4(65.21,181.36) v4(65.21,167.92) v4(65.23,84.05) v4(65.18,72.21) v4(65.17,25.83) v4(65.17,7.2) v4(65.33,205.47) v4(65.33,204.08) v4(65.29,70.08) v4(65.36,145.8) v4(65.36,144.4) v4(65.4,86.19) v4(65.45,48.18) v4(65.45,46.79) v4(65.63,183.09) v4(65.56,23.05) v4(65.55,9.98) v4(65.7,180.71) v4(65.71,168.56) v4(65.68,72.86) v4(65.67,25.18) v4(65.66,7.84) v4(65.82,166.42) v4(65.79,108.95) v4(65.79,107.56) v4(65.75,83.38) v4(65.78,70.72) v4(65.87,85.55) v4(66.1,242.11) v4(66.1,227.79) v4(66.14,205.47) v4(66.14,204.08) v4(66.12,182.45) v4(66.05,22.4) v4(66.05,10.62) v4(66.2,180.07) v4(66.21,169.2) v4(66.17,145.8) v4(66.17,144.4) v4(66.22,82.76) v4(66.17,73.5) v4(66.16,24.54) v4(66.16,8.48) v4(66.31,167.07) v4(66.34,84.9) v4(66.28,71.36) v4(66.26,48.18) v4(66.26,46.79) v4(66.55,21.76) v4(66.55,11.26) v4(66.6,241.47) v4(66.6,228.43) v4(66.62,181.8) v4(66.6,108.95) v4(66.6,107.56) v4(66.69,179.42) v4(66.7,169.85) v4(66.67,82.07) v4(66.67,74.14) v4(66.66,23.9) v4(66.66,9.13) v4(66.81,167.71) v4(66.78,72.01) v4(66.86,84.23) v4(66.95,205.47) v4(66.95,204.08) v4(66.99,145.8) v4(66.99,144.4) v4(67.04,21.11) v4(67.05,11.91) v4(67.1,240.82) v4(67.1,229.08) v4(67.11,181.16) v4(67.07,48.18) v4(67.07,46.79) v4(67.19,178.78) v4(67.2,170.49) v4(67.16,81.42) v4(67.17,74.79) v4(67.15,23.25) v4(67.15,9.77) v4(67.31,168.35) v4(67.33,83.61) v4(67.27,72.65) v4(67.41,108.95) v4(67.41,107.56) v4(67.46,242.63) v4(67.46,227.27) v4(67.51,177.38) v4(67.51,176.38) v4(67.51,175.38) v4(67.51,174.38) v4(67.51,173.38) v4(67.51,172.38) v4(67.51,80.17) v4(67.51,79.17) v4(67.51,78.17) v4(67.51,77.17) v4(67.51,76.17) v4(67.54,20.47) v4(67.54,12.55) v4(67.59,240.18) v4(67.59,229.72) v4(67.61,180.51) v4(67.65,22.61) v4(67.64,18.89) v4(67.64,17.89) v4(67.64,16.89) v4(67.64,15.89) v4(67.64,14.89) v4(67.64,13.89) v4(67.68,178.13) v4(67.7,171.13) v4(67.66,80.78) v4(67.66,75.43) v4(67.65,10.41) v4(67.81,169) v4(67.8,145.8) v4(67.8,144.4) v4(67.77,82.92) v4(67.77,73.29) v4(67.95,241.99) v4(67.95,227.91) v4(68.03,19.82) v4(68.04,13.19) v4(68.09,239.54) v4(68.09,230.36) v4(68.1,179.87) v4(68.14,21.96) v4(68.15,11.06) v4(68.18,177.49) v4(68.19,171.78) v4(68.22,108.95) v4(68.22,107.56) v4(68.15,80.13) v4(68.16,76.07) v4(68.3,169.64) v4(68.27,82.27) v4(68.27,73.94) v4(68.45,241.35) v4(68.45,228.55) v4(68.51,83.17) v4(68.51,73.17) v4(68.53,19.18) v4(68.54,13.84) v4(68.59,238.9) v4(68.59,231) v4(68.6,179.22) v4(68.65,79.49) v4(68.64,21.32) v4(68.64,11.7) v4(68.67,176.84) v4(68.69,172.42) v4(68.66,76.72) v4(68.8,170.28) v4(68.76,81.63) v4(68.77,74.58) v4(68.95,240.71) v4(68.95,229.19) v4(69.02,18.53) v4(69.03,14.48) v4(69.08,238.25) v4(69.08,231.65) v4(69.09,178.58) v4(69.14,78.84) v4(69.14,21.89) v4(69.13,20.67) v4(69.14,12.34) v4(69.17,176.2) v4(69.19,173.06) v4(69.16,77.36) v4(69.25,17.8) v4(69.3,170.92) v4(69.26,80.98) v4(69.26,75.22) v4(69.28,15.26) v4(69.44,240.06) v4(69.41,237.05) v4(69.41,236.05) v4(69.41,235.05) v4(69.41,234.05) v4(69.41,233.05) v4(69.44,229.84) v4(69.35,78.1) v4(69.51,179.38) v4(69.51,169.38) v4(69.51,83.17) v4(69.51,73.17) v4(69.58,237.61) v4(69.58,232.29) v4(69.59,177.93) v4(69.63,20.03) v4(69.64,12.99) v4(69.64,11.39) v4(69.66,175.55) v4(69.69,173.71) v4(69.79,171.57) v4(69.75,80.34) v4(69.76,75.87) v4(69.94,239.42) v4(69.94,230.48) v4(69.92,174.7) v4(69.9,17.4) v4(70.01,15.62) v4(70.08,236.97) v4(70.08,232.93) v4(70.08,177.29) v4(70.14,21.89) v4(70.12,19.38) v4(70.14,13.63) v4(70.25,79.69) v4(70.29,172.21) v4(70.26,76.51) v4(70.41,240.05) v4(70.44,238.78) v4(70.44,231.12) v4(70.41,230.05) v4(70.51,179.38) v4(70.51,169.38) v4(70.51,83.17) v4(70.51,73.17) v4(70.5,17.4) v4(70.52,15.63) v4(70.58,236.32) v4(70.58,233.58) v4(70.58,176.65) v4(70.64,11.39) v4(70.7,19.21) v4(70.71,13.82) v4(70.79,172.85) v4(70.81,79.52) v4(70.83,76.7) v4(70.94,238.13) v4(70.94,231.77) v4(70.88,176.23) v4(71.07,235.68) v4(71.07,234.22) v4(71.14,21.89) v4(71.26,234.95) v4(71.33,17.28) v4(71.32,15.73) v4(71.41,240.05) v4(71.43,237.49) v4(71.43,232.41) v4(71.41,230.05) v4(71.43,173.03) v4(71.51,179.38) v4(71.51,169.38) v4(71.51,83.17) v4(71.51,73.17) v4(71.5,19.36) v4(71.52,16.5) v4(71.48,13.7) v4(71.64,11.39) v4(71.67,176.22) v4(71.76,79.23) v4(71.75,76.96) v4(71.93,236.85) v4(71.93,233.05) v4(72.14,21.89) v4(72.16,236.37) v4(72.19,233.55) v4(72.17,13.45) v4(72.29,173.27) v4(72.28,19.57) v4(72.41,240.05) v4(72.41,230.05) v4(72.46,175.94) v4(72.58,79.16) v4(72.57,77.05) v4(72.87,236.35) v4(72.87,233.55) v4(72.93,13.46) v4(73.03,78.87) v4(73.03,77.34) v4(73.03,19.59) v4(73.08,173.31) v4(73.24,175.94) v4(73.41,240.05) v4(73.41,230.05) v4(73.44,76.99) v4(73.51,179.38) v4(73.51,169.38) v4(73.51,83.17) v4(73.45,79.17) v4(73.51,73.17) v4(73.64,13.41) v4(73.71,236.07) v4(73.66,233.83) v4(73.71,77.69) v4(73.84,19.62) v4(74.14,21.89) v4(74.14,11.39) v4(74.24,79.11) v4(74.29,175.93) v4(74.28,173.32) v4(74.31,77.38) v4(74.37,13.45) v4(74.47,236.02) v4(74.47,233.88) v4(74.51,179.38) v4(74.51,169.38) v4(74.51,83.17) v4(74.51,73.17) v4(74.6,19.58) v4(74.93,235.71) v4(74.93,234.19) v4(75.12,175.82) v4(75.12,174.42) v4(75.05,173.61) v4(75.06,79.11) v4(75.06,77.71) v4(75.14,21.89) v4(75.14,11.39) v4(75.25,13.46) v4(75.33,19.58) v4(75.41,240.05) v4(75.39,236.02) v4(75.41,233.86) v4(75.41,230.05) v4(75.51,179.38) v4(75.51,169.38) v4(75.51,83.17) v4(75.51,73.17) v4(75.75,16.34) v4(75.94,175.82) v4(75.94,174.42) v4(75.87,79.11) v4(75.87,77.71) v4(75.91,19.1) v4(75.9,17.07) v4(75.93,15.54) v4(75.93,14.74) v4(75.92,13.93) v4(76.15,235.95) v4(76.14,21.89) v4(76.14,11.39) v4(76.28,234.42) v4(76.41,240.05) v4(76.41,230.05) v4(76.41,18.8) v4(76.41,17.4) v4(76.51,179.38) v4(76.51,169.38) v4(76.51,83.17) v4(76.51,73.17) v4(76.75,175.82) v4(76.75,174.42) v4(76.68,79.11) v4(76.68,77.71) v4(76.96,235.95) v4(76.96,234.56) v4(77.14,21.89) v4(77.14,11.39) v4(77.22,18.8) v4(77.22,17.4) v4(77.41,240.05) v4(77.41,230.05) v4(77.51,179.38) v4(77.51,178.38) v4(77.51,177.38) v4(77.51,176.38) v4(77.51,173.38) v4(77.51,172.38) v4(77.51,171.38) v4(77.51,170.38) v4(77.51,169.38) v4(77.51,83.17) v4(77.51,82.17) v4(77.51,81.17) v4(77.51,80.17) v4(77.5,79.11) v4(77.5,77.71) v4(77.51,77.17) v4(77.51,76.17) v4(77.51,75.17) v4(77.51,74.17) v4(77.51,73.17) v4(77.56,175.82) v4(77.56,174.42) v4(77.77,235.95) v4(77.77,234.56) v4(78.03,18.8) v4(78.03,17.4) v4(78.14,21.89) v4(78.14,20.89) v4(78.14,19.89) v4(78.14,16.39) v4(78.14,15.39) v4(78.14,14.39) v4(78.14,13.39) v4(78.14,12.39) v4(78.14,11.39) v4(78.31,79.11) v4(78.31,77.71) v4(78.41,240.05) v4(78.41,230.05) v4(78.37,175.82) v4(78.37,174.42) v4(78.59,235.95) v4(78.59,234.56) v4(78.85,18.8) v4(78.85,17.4) v4(79.12,79.11) v4(79.12,77.71) v4(79.19,175.82) v4(79.19,174.42) v4(79.41,240.05) v4(79.41,239.05) v4(79.41,238.05) v4(79.41,237.05) v4(79.4,235.95) v4(79.4,234.56) v4(79.41,234.05) v4(79.41,233.05) v4(79.41,232.05) v4(79.41,231.05) v4(79.41,230.05) v4(79.66,18.8) v4(79.66,17.4) v4(79.93,79.11) v4(79.93,77.71) v4(80,175.82) v4(80,174.42) v4(80.21,235.95) v4(80.21,234.56) v4(80.47,18.8) v4(80.47,17.4) v4(80.75,79.11) v4(80.75,77.71) v4(80.81,175.82) v4(80.81,174.42) v4(81.03,235.95) v4(81.03,234.56) v4(81.29,18.8) v4(81.29,17.4) v4(81.63,175.82) v4(81.63,174.42) v4(81.56,79.11) v4(81.56,77.71) v4(81.84,235.95) v4(81.84,234.56) v4(82.1,18.8) v4(82.1,17.4) v4(82.3,175.84) v4(82.3,174.45) v4(82.65,235.95) v4(82.65,234.56) v4(82.91,18.8) v4(82.91,17.4) v4(83.14,151.96) v4(83.13,135.06) v4(83.46,235.95) v4(83.46,234.56) v4(83.63,151.32) v4(83.62,135.71) v4(83.78,54.35) v4(83.75,39.62) v4(83.88,197.31) v4(83.88,100.79) v4(84.13,150.67) v4(84.12,136.35) v4(84.11,115.16) v4(84.23,134.21) v4(84.27,53.7) v4(84.25,40.27) v4(84.39,210.99) v4(84.38,197.95) v4(84.38,101.43) v4(84.62,150.03) v4(84.62,136.99) v4(84.61,114.52) v4(84.74,152.16) v4(84.72,134.86) v4(84.75,40.91) v4(84.77,53.06) v4(84.88,210.35) v4(84.88,198.6) v4(84.88,102.08) v4(84.88,55.19) v4(84.86,38.77) v4(84.98,196.46) v4(85,113.88) v4(85.12,149.38) v4(85.11,137.64) v4(85.23,151.52) v4(85.22,135.5) v4(85.24,100.27) v4(85.24,41.55) v4(85.26,52.41) v4(85.38,209.7) v4(85.37,199.24) v4(85.37,102.72) v4(85.38,54.55) v4(85.35,39.42) v4(85.49,211.84) v4(85.48,197.1) v4(85.47,115.69) v4(85.5,113.23) v4(85.61,148.74) v4(85.61,138.28) v4(85.73,150.87) v4(85.72,136.14) v4(85.73,100.91) v4(85.74,42.2) v4(85.76,51.77) v4(85.85,40.06) v4(85.87,209.06) v4(85.87,199.88) v4(85.87,103.36) v4(85.87,53.9) v4(85.99,211.19) v4(85.98,197.74) v4(85.96,115.04) v4(86,112.59) v4(86.11,148.09) v4(86.11,138.92) v4(86.22,150.23) v4(86.22,136.79) v4(86.23,101.55) v4(86.24,42.84) v4(86.25,51.12) v4(86.27,50.21) v4(86.27,49.21) v4(86.27,48.21) v4(86.27,47.21) v4(86.27,46.21) v4(86.27,45.21) v4(86.27,44.21) v4(86.35,40.7) v4(86.37,208.41) v4(86.37,200.52) v4(86.36,114.4) v4(86.37,104) v4(86.37,53.26) v4(86.48,210.55) v4(86.48,198.39) v4(86.49,111.95) v4(86.6,147.45) v4(86.6,139.57) v4(86.72,149.59) v4(86.71,137.43) v4(86.73,102.19) v4(86.75,50.48) v4(86.74,43.48) v4(86.84,41.34) v4(86.86,207.77) v4(86.9,206.57) v4(86.9,205.57) v4(86.9,204.57) v4(86.9,203.57) v4(86.9,202.57) v4(86.86,201.17) v4(86.9,146.42) v4(86.9,145.42) v4(86.9,144.42) v4(86.9,143.42) v4(86.9,142.42) v4(86.9,141.42) v4(86.85,113.76) v4(86.86,111.25) v4(86.86,104.65) v4(86.86,52.62) v4(86.98,209.9) v4(86.97,199.03) v4(87.1,146.8) v4(87.1,140.21) v4(87.21,148.94) v4(87.21,138.07) v4(87.19,110.05) v4(87.19,109.05) v4(87.19,108.05) v4(87.19,107.05) v4(87.19,106.05) v4(87.22,102.84) v4(87.24,49.83) v4(87.23,44.13) v4(87.34,41.99) v4(87.36,207.12) v4(87.36,201.81) v4(87.35,113.11) v4(87.36,110.61) v4(87.36,105.29) v4(87.36,51.97) v4(87.47,209.26) v4(87.47,199.67) v4(87.59,146.16) v4(87.6,140.85) v4(87.71,148.3) v4(87.71,138.71) v4(87.72,103.48) v4(87.74,49.19) v4(87.73,44.77) v4(87.85,112.47) v4(87.84,42.63) v4(87.77,41.71) v4(87.9,209.57) v4(87.85,206.48) v4(87.86,202.45) v4(87.9,199.57) v4(87.86,109.97) v4(87.86,105.93) v4(87.85,51.33) v4(87.97,208.62) v4(87.97,200.32) v4(88.09,145.51) v4(88.1,141.5) v4(88.2,147.65) v4(88.2,139.36) v4(88.19,113.05) v4(88.22,111.78) v4(88.22,104.12) v4(88.19,103.05) v4(88.23,48.54) v4(88.23,45.41) v4(88.35,205.83) v4(88.31,144.76) v4(88.29,142.22) v4(88.27,52.21) v4(88.35,50.68) v4(88.33,43.27) v4(88.36,203.1) v4(88.36,109.32) v4(88.36,106.58) v4(88.46,207.97) v4(88.46,200.96) v4(88.7,147.01) v4(88.7,140) v4(88.72,111.13) v4(88.72,104.77) v4(88.73,47.9) v4(88.72,46.05) v4(88.84,205.19) v4(88.84,50.04) v4(88.83,43.92) v4(88.77,41.71) v4(88.9,209.57) v4(88.85,203.74) v4(88.9,199.57) v4(88.9,148.42) v4(88.9,138.42) v4(88.85,108.68) v4(88.85,107.22) v4(88.96,207.33) v4(89.05,204.47) v4(88.96,201.6) v4(89.02,144.41) v4(89.02,142.63) v4(89.04,107.95) v4(88.97,46.94) v4(89.19,146.36) v4(89.2,140.64) v4(89.19,113.05) v4(89.21,110.49) v4(89.21,105.41) v4(89.19,103.05) v4(89.27,52.21) v4(89.34,49.39) v4(89.33,44.56) v4(89.45,206.68) v4(89.46,202.25) v4(89.62,142.61) v4(89.68,146.21) v4(89.66,144.41) v4(89.74,140.82) v4(89.71,109.85) v4(89.71,106.05) v4(89.83,48.75) v4(89.83,45.2) v4(89.77,41.71) v4(89.9,209.57) v4(89.95,206.04) v4(89.9,199.57) v4(89.9,148.42) v4(89.9,138.42) v4(89.94,109.37) v4(89.95,202.89) v4(89.97,106.55) v4(90.19,113.05) v4(90.19,103.05) v4(90.27,52.21) v4(90.39,144.25) v4(90.37,142.72) v4(90.48,146.25) v4(90.49,140.74) v4(90.53,48.6) v4(90.52,45.39) v4(90.63,205.88) v4(90.63,203.06) v4(90.56,143.49) v4(90.65,109.35) v4(90.65,106.55) v4(90.9,209.57) v4(90.9,199.57) v4(90.9,148.42) v4(90.9,138.42) v4(91.19,140.45) v4(91.19,113.05) v4(91.19,103.05) v4(91.26,146.56) v4(91.35,48.34) v4(91.44,106.83) v4(91.36,45.64) v4(91.47,205.59) v4(91.48,203.34) v4(91.49,109.07) v4(91.93,140.46) v4(92.1,146.59) v4(92.14,45.68) v4(92.23,48.31) v4(92.26,205.53) v4(92.26,203.41) v4(92.25,109.02) v4(92.25,106.88) v4(92.71,205.23) v4(92.71,203.71) v4(92.71,108.71) v4(92.71,107.19) v4(92.76,140.4) v4(92.77,52.21) v4(92.77,41.71) v4(92.9,209.57) v4(92.9,199.57) v4(92.91,146.61) v4(92.9,45.64) v4(93.14,205.53) v4(93.19,113.05) v4(93.17,109.02) v4(93.19,106.86) v4(93.19,103.05) v4(93.17,48.3) v4(93.28,203.36) v4(93.39,204.06) v4(93.4,148.42) v4(93.4,138.42) v4(93.65,146.58) v4(93.58,140.45) v4(93.68,45.69) v4(93.77,52.21) v4(93.77,41.71) v4(93.9,209.57) v4(93.93,205.47) v4(93.9,199.57) v4(93.93,108.95) v4(94.02,203.76) v4(94.05,48.18) v4(94.06,107.42) v4(94.19,113.05) v4(94.19,103.05) v4(94.2,46.37) v4(94.35,140.45) v4(94.4,148.42) v4(94.4,138.42) v4(94.51,146.54) v4(94.74,205.47) v4(94.74,204.08) v4(94.74,108.95) v4(94.74,107.56) v4(94.81,143.28) v4(94.77,52.21) v4(94.77,41.71) v4(94.9,209.57) v4(94.9,199.57) v4(94.92,144.03) v4(94.86,48.18) v4(94.86,46.79) v4(94.97,146.06) v4(94.98,142.54) v4(94.98,141.74) v4(94.96,140.95) v4(95.19,113.05) v4(95.19,103.05) v4(95.4,148.42) v4(95.4,138.42) v4(95.55,205.47) v4(95.55,204.08) v4(95.59,145.8) v4(95.57,144.42) v4(95.55,108.95) v4(95.55,107.56) v4(95.67,48.18) v4(95.67,46.79) v4(95.77,52.21) v4(95.77,41.71) v4(95.9,209.57) v4(95.9,199.57) v4(96.19,113.05) v4(96.19,103.05) v4(96.37,205.47) v4(96.37,204.08) v4(96.4,148.42) v4(96.4,145.8) v4(96.4,144.4) v4(96.4,138.42) v4(96.37,108.95) v4(96.37,107.56) v4(96.48,48.18) v4(96.48,46.79) v4(96.77,52.21) v4(96.77,51.21) v4(96.77,50.21) v4(96.77,49.21) v4(96.77,45.71) v4(96.77,44.71) v4(96.77,43.71) v4(96.77,42.71) v4(96.77,41.71) v4(96.9,209.57) v4(96.9,208.57) v4(96.9,207.57) v4(96.9,206.57) v4(96.9,203.57) v4(96.9,202.57) v4(96.9,201.57) v4(96.9,200.57) v4(96.9,199.57) v4(97.18,205.47) v4(97.18,204.08) v4(97.21,145.8) v4(97.21,144.4) v4(97.19,113.05) v4(97.19,112.05) v4(97.19,111.05) v4(97.19,110.05) v4(97.18,108.95) v4(97.18,107.56) v4(97.19,107.05) v4(97.19,106.05) v4(97.19,105.05) v4(97.19,104.05) v4(97.19,103.05) v4(97.3,48.18) v4(97.3,46.79) v4(97.4,148.42) v4(97.4,147.42) v4(97.4,146.42) v4(97.4,143.42) v4(97.4,142.42) v4(97.4,141.42) v4(97.4,140.42) v4(97.4,139.42) v4(97.4,138.42) v4(97.99,205.47) v4(97.99,204.08) v4(98.02,145.8) v4(98.02,144.4) v4(97.99,108.95) v4(97.99,107.56) v4(98.11,48.18) v4(98.11,46.79) v4(98.36,24.98) v4(98.35,8.05) v4(98.81,205.47) v4(98.81,204.08) v4(98.84,145.8) v4(98.84,144.4) v4(98.81,108.95) v4(98.81,107.56) v4(98.92,48.18) v4(98.92,46.79) v4(98.86,24.34) v4(98.85,8.69) v4(99.02,181.98) v4(99.01,167.27) v4(99.12,242.11) v4(99.12,227.79) v4(99.11,70.29) v4(99.29,84.69) v4(99.35,9.33) v4(99.35,23.69) v4(99.51,181.34) v4(99.5,167.92) v4(99.46,25.83) v4(99.46,7.2) v4(99.62,241.47) v4(99.62,228.43) v4(99.62,205.47) v4(99.62,204.08) v4(99.65,145.8) v4(99.65,144.4) v4(99.62,108.95) v4(99.62,107.56) v4(99.61,70.94) v4(99.74,48.18) v4(99.74,46.79) v4(99.78,84.04) v4(99.85,23.05) v4(99.84,9.98) v4(100.01,180.69) v4(100,168.56) v4(99.96,25.18) v4(99.95,7.84) v4(100.12,240.82) v4(100.12,229.08) v4(100.12,182.83) v4(100.11,166.42) v4(100.1,71.58) v4(100.22,83.37) v4(100.21,69.44) v4(100.34,22.4) v4(100.34,10.62) v4(100.43,205.47) v4(100.43,204.08) v4(100.43,108.95) v4(100.43,107.56) v4(100.39,85.53) v4(100.45,8.48) v4(100.48,242.63) v4(100.48,227.27) v4(100.5,180.05) v4(100.5,169.2) v4(100.46,145.8) v4(100.46,144.4) v4(100.55,48.18) v4(100.55,46.79) v4(100.45,24.54) v4(100.61,240.18) v4(100.61,229.72) v4(100.62,182.18) v4(100.6,167.07) v4(100.6,72.22) v4(100.72,82.73) v4(100.71,70.09) v4(100.84,21.76) v4(100.84,11.26) v4(100.88,84.89) v4(100.95,23.9) v4(100.95,9.13) v4(100.97,241.99) v4(100.97,227.91) v4(101,179.4) v4(100.99,169.85) v4(101.11,239.54) v4(101.11,230.36) v4(101.11,181.54) v4(101.1,167.71) v4(101.1,72.87) v4(101.24,205.47) v4(101.24,204.08) v4(101.24,108.95) v4(101.24,107.56) v4(101.21,82.08) v4(101.21,70.73) v4(101.28,145.8) v4(101.28,144.4) v4(101.33,84.22) v4(101.33,21.11) v4(101.34,11.91) v4(101.36,48.18) v4(101.36,46.79) v4(101.44,23.25) v4(101.44,9.77) v4(101.47,241.35) v4(101.47,228.55) v4(101.49,178.76) v4(101.51,177.38) v4(101.51,176.38) v4(101.51,175.38) v4(101.51,174.38) v4(101.51,173.38) v4(101.51,172.38) v4(101.51,171.38) v4(101.49,170.49) v4(101.61,238.9) v4(101.61,231) v4(101.61,180.89) v4(101.6,168.35) v4(101.6,73.51) v4(101.68,81.44) v4(101.7,71.37) v4(101.82,83.57) v4(101.83,20.47) v4(101.83,12.55) v4(101.94,145.85) v4(101.94,144.46) v4(101.94,22.61) v4(101.94,10.41) v4(101.97,240.71) v4(101.97,229.19) v4(101.99,178.11) v4(101.99,171.13) v4(102.01,80.17) v4(102.01,79.17) v4(102.01,78.17) v4(102.01,77.17) v4(102.01,76.17) v4(102.01,75.17) v4(102.1,238.25) v4(102.1,231.65) v4(102.1,180.25) v4(102.1,169) v4(102.1,80.77) v4(102.09,74.15) v4(102.14,18.89) v4(102.14,17.89) v4(102.14,16.89) v4(102.14,15.89) v4(102.14,14.89) v4(102.14,13.89) v4(102.2,72.01) v4(102.32,82.93) v4(102.32,19.82) v4(102.33,13.19) v4(102.43,237.05) v4(102.43,236.05) v4(102.43,235.05) v4(102.43,234.05) v4(102.43,233.05) v4(102.43,21.96) v4(102.44,11.06) v4(102.46,240.06) v4(102.46,229.84) v4(102.48,177.47) v4(102.48,171.78) v4(102.6,237.61) v4(102.6,232.29) v4(102.6,179.61) v4(102.59,169.64) v4(102.6,80.12) v4(102.59,74.8) v4(102.7,72.66) v4(102.79,82.29) v4(102.82,19.18) v4(102.83,13.84) v4(102.93,21.32) v4(102.93,11.7) v4(102.96,239.42) v4(102.96,230.48) v4(102.98,176.82) v4(102.98,172.42) v4(103.01,72.17) v4(103.1,236.97) v4(103.1,232.93) v4(103.09,178.96) v4(103.09,170.28) v4(103.09,79.48) v4(103.09,75.44) v4(103.14,11.39) v4(103.21,81.62) v4(103.19,73.3) v4(103.31,18.53) v4(103.32,14.48) v4(103.43,240.05) v4(103.43,230.05) v4(103.42,20.67) v4(103.43,12.34) v4(103.46,238.78) v4(103.46,231.12) v4(103.51,179.38) v4(103.47,176.18) v4(103.48,173.06) v4(103.51,169.38) v4(103.51,82.67) v4(103.6,236.32) v4(103.6,233.58) v4(103.59,178.32) v4(103.59,170.92) v4(103.59,78.83) v4(103.58,76.08) v4(103.64,21.89) v4(103.59,17.68) v4(103.56,15.28) v4(103.7,80.97) v4(103.69,73.94) v4(103.92,20.03) v4(103.93,12.99) v4(103.96,238.13) v4(103.96,231.77) v4(103.97,175.53) v4(103.98,173.71) v4(104.01,72.17) v4(104.09,235.68) v4(104.09,234.22) v4(104.08,177.67) v4(104.08,171.57) v4(104.08,78.19) v4(104.08,76.72) v4(104.14,11.39) v4(104.2,80.33) v4(104.19,74.59) v4(104.28,234.95) v4(104.29,77.47) v4(104.43,240.05) v4(104.43,230.05) v4(104.41,19.38) v4(104.42,17.4) v4(104.37,15.62) v4(104.43,13.63) v4(104.45,237.49) v4(104.45,232.41) v4(104.51,179.38) v4(104.51,169.38) v4(104.51,82.67) v4(104.58,177.03) v4(104.58,172.21) v4(104.64,21.89) v4(104.69,79.68) v4(104.68,75.23) v4(104.95,236.85) v4(104.95,233.05) v4(105.01,72.17) v4(104.98,19.2) v4(105.05,17.41) v4(105.03,15.62) v4(105.01,13.82) v4(105.07,176.38) v4(105.08,172.85) v4(105.14,11.39) v4(105.18,236.37) v4(105.21,233.55) v4(105.19,79.04) v4(105.18,75.87) v4(105.43,240.05) v4(105.43,230.05) v4(105.51,179.38) v4(105.51,169.38) v4(105.51,82.67) v4(105.61,176.22) v4(105.64,21.89) v4(105.73,173.03) v4(105.72,16.94) v4(105.73,16.06) v4(105.78,78.88) v4(105.75,76.06) v4(105.76,19.29) v4(105.82,13.63) v4(105.89,236.35) v4(105.89,233.55) v4(106.01,72.17) v4(106.14,11.39) v4(106.43,240.05) v4(106.43,230.05) v4(106.43,176.01) v4(106.54,173.26) v4(106.52,19.57) v4(106.73,236.07) v4(106.68,233.83) v4(106.68,78.61) v4(106.68,76.33) v4(106.67,13.45) v4(107.17,175.93) v4(107.31,19.59) v4(107.38,173.32) v4(107.49,236.02) v4(107.49,233.88) v4(107.51,179.38) v4(107.51,169.38) v4(107.5,78.53) v4(107.53,76.4) v4(107.56,13.39) v4(107.87,175.98) v4(107.95,235.71) v4(107.95,234.19) v4(107.95,78.23) v4(107.95,76.71) v4(108.06,19.62) v4(108.21,173.27) v4(108.43,240.05) v4(108.41,236.02) v4(108.43,233.86) v4(108.43,230.05) v4(108.36,78.54) v4(108.42,13.42) v4(108.51,179.38) v4(108.51,169.38) v4(108.51,82.67) v4(108.48,76.36) v4(108.51,72.17) v4(108.62,175.93) v4(108.63,77.06) v4(108.64,21.89) v4(108.64,11.39) v4(108.75,19.57) v4(108.97,173.33) v4(109.17,235.95) v4(109.17,78.47) v4(109.3,234.42) v4(109.26,76.78) v4(109.28,13.46) v4(109.43,240.05) v4(109.43,230.05) v4(109.41,175.82) v4(109.41,174.42) v4(109.41,173.77) v4(109.51,179.38) v4(109.51,169.38) v4(109.51,82.67) v4(109.51,72.17) v4(109.49,19.57) v4(109.64,21.89) v4(109.64,11.39) v4(109.98,235.95) v4(109.98,234.56) v4(109.98,78.47) v4(109.98,77.08) v4(110.05,13.64) v4(110.11,19.3) v4(110.1,16.9) v4(110.23,175.82) v4(110.23,174.42) v4(110.16,16.04) v4(110.22,15.23) v4(110.23,14.44) v4(110.43,240.05) v4(110.43,230.05) v4(110.51,179.38) v4(110.51,169.38) v4(110.51,82.67) v4(110.51,72.17) v4(110.64,21.89) v4(110.64,11.39) v4(110.7,18.8) v4(110.7,17.4) v4(110.79,235.95) v4(110.79,234.56) v4(110.79,78.47) v4(110.79,77.08) v4(111.04,175.82) v4(111.04,174.42) v4(111.43,240.05) v4(111.43,230.05) v4(111.51,179.38) v4(111.51,178.38) v4(111.51,177.38) v4(111.51,176.38) v4(111.51,173.38) v4(111.51,172.38) v4(111.51,171.38) v4(111.51,170.38) v4(111.51,169.38) v4(111.51,82.67) v4(111.51,72.17) v4(111.51,18.8) v4(111.51,17.4) v4(111.61,235.95) v4(111.61,234.56) v4(111.61,78.47) v4(111.61,77.08) v4(111.64,21.89) v4(111.64,11.39) v4(111.85,175.82) v4(111.85,174.42) v4(112.32,18.8) v4(112.32,17.4) v4(112.43,240.05) v4(112.43,239.05) v4(112.43,238.05) v4(112.43,237.05) v4(112.42,235.95) v4(112.42,234.56) v4(112.43,234.05) v4(112.43,233.05) v4(112.43,232.05) v4(112.43,231.05) v4(112.43,230.05) v4(112.42,78.47) v4(112.42,77.08) v4(112.51,82.67) v4(112.51,81.67) v4(112.51,80.67) v4(112.51,79.67) v4(112.51,76.17) v4(112.51,75.17) v4(112.51,74.17) v4(112.51,73.17) v4(112.51,72.17) v4(112.64,21.89) v4(112.64,20.89) v4(112.64,19.89) v4(112.64,16.39) v4(112.64,15.39) v4(112.64,14.39) v4(112.64,13.39) v4(112.64,12.39) v4(112.64,11.39) v4(112.66,175.82) v4(112.66,174.42) v4(113.14,18.8) v4(113.14,17.4) v4(113.23,235.95) v4(113.23,234.56) v4(113.23,78.47) v4(113.23,77.08) v4(113.48,175.82) v4(113.48,174.42) v4(113.95,18.8) v4(113.95,17.4) v4(114.05,235.95) v4(114.05,234.56) v4(114.05,78.47) v4(114.05,77.08) v4(114.29,175.82) v4(114.29,174.42) v4(114.76,18.8) v4(114.76,17.4) v4(114.86,235.95) v4(114.86,234.56) v4(114.86,78.47) v4(114.86,77.08) v4(115.1,175.82) v4(115.1,174.42) v4(115.58,18.8) v4(115.58,17.4) v4(115.67,235.95) v4(115.67,234.56) v4(115.67,78.47) v4(115.67,77.08) v4(115.92,175.82) v4(115.92,174.42) v4(116.39,18.8) v4(116.39,17.4) v4(116.48,235.95) v4(116.48,234.56) v4(116.48,78.47) v4(116.48,77.08) v4(116.73,175.82) v4(116.73,174.42) v4(117.2,18.8) v4(117.2,17.4) v5(12.65,135.25) v5(12.68,118.24) v5(12.85,135.74) v5(12.85,134.77) v5(12.88,118.72) v5(12.88,117.75) v5(13.34,135.94) v5(13.34,134.57) v5(13.36,118.92) v5(13.36,117.55) v5(13.82,135.74) v5(13.82,134.77) v5(13.84,117.75) v5(14.04,118.24) v5(15.18,118.24) v5(15.35,135.74) v5(15.35,134.77) v5(15.38,117.75) v5(15.83,135.94) v5(15.83,134.57) v5(15.86,118.92) v5(15.86,117.55) v5(16.32,135.74) v5(16.32,134.77) v5(16.34,118.72) v5(16.34,117.75) v5(16.52,135.25) v5(16.54,118.24) v5(17.65,135.25) v5(17.68,118.24) v5(17.85,135.74) v5(17.85,134.77) v5(17.88,118.72) v5(17.88,117.75) v5(18.33,135.94) v5(18.33,134.57) v5(18.36,118.92) v5(18.36,117.55) v5(18.82,135.74) v5(18.82,134.77) v5(18.84,117.75) v5(19.04,118.24) v5(20.18,118.24) v5(20.35,135.74) v5(20.35,134.77) v5(20.38,117.75) v5(20.83,135.94) v5(20.83,134.57) v5(20.86,118.92) v5(20.86,117.55) v5(21.32,135.74) v5(21.32,134.77) v5(21.34,118.72) v5(21.34,117.75) v5(21.52,135.25) v5(21.54,118.24) v5(22.65,135.26) v5(22.68,118.24) v5(22.85,135.74) v5(22.85,134.77) v5(22.88,118.72) v5(22.88,117.75) v5(23.34,135.94) v5(23.34,134.57) v5(23.36,118.92) v5(23.36,117.55) v5(23.82,135.74) v5(23.82,134.77) v5(23.84,117.75) v5(24.04,118.24) v5(25.18,118.24) v5(25.35,135.74) v5(25.35,134.77) v5(25.38,117.75) v5(25.84,135.94) v5(25.84,134.57) v5(25.86,118.92) v5(25.86,117.55) v5(26.32,135.74) v5(26.32,134.77) v5(26.34,118.72) v5(26.34,117.75) v5(26.52,135.25) v5(26.54,118.24) v5(26.62,206.38) v5(26.62,203.88) v5(26.62,201.38) v5(26.62,198.88) v5(26.62,196.37) v5(26.62,193.88) v5(26.62,191.4) v5(26.62,173.35) v5(26.62,170.86) v5(26.62,168.36) v5(26.62,165.86) v5(26.62,163.35) v5(26.62,160.85) v5(26.62,158.36) v5(26.62,155.86) v5(26.62,90.81) v5(26.62,88.31) v5(26.62,85.81) v5(26.62,83.31) v5(26.62,80.8) v5(26.62,78.31) v5(26.62,75.81) v5(26.62,73.31) v5(26.62,57.78) v5(26.62,55.29) v5(26.62,52.79) v5(26.62,50.29) v5(26.62,47.78) v5(26.62,45.28) v5(26.62,42.73) v5(26.67,40.02) v5(26.82,206.86) v5(26.82,203.39) v5(26.82,201.86) v5(26.82,198.39) v5(26.82,196.86) v5(26.82,193.39) v5(26.84,191.88) v5(26.82,188.39) v5(26.82,173.84) v5(26.82,170.37) v5(26.82,168.84) v5(26.82,165.37) v5(26.82,163.84) v5(26.82,160.37) v5(26.82,158.84) v5(26.82,155.37) v5(26.82,91.29) v5(26.82,87.82) v5(26.82,86.29) v5(26.82,82.82) v5(26.82,81.29) v5(26.82,77.82) v5(26.82,76.29) v5(26.82,72.82) v5(26.82,58.27) v5(26.82,54.8) v5(26.82,53.27) v5(26.82,49.8) v5(26.82,48.27) v5(26.82,44.8) v5(26.78,43.22) v5(27.04,39.65) v5(27.25,43.47) v5(27.3,207.06) v5(27.3,203.19) v5(27.3,202.06) v5(27.3,198.19) v5(27.3,197.06) v5(27.3,193.19) v5(27.33,192.06) v5(27.3,189.56) v5(27.3,188.19) v5(27.3,174.04) v5(27.3,170.17) v5(27.3,169.04) v5(27.3,165.17) v5(27.3,164.04) v5(27.3,160.17) v5(27.3,159.04) v5(27.3,156.54) v5(27.3,155.17) v5(27.3,91.49) v5(27.3,87.62) v5(27.3,86.49) v5(27.3,82.62) v5(27.3,81.49) v5(27.3,77.62) v5(27.3,76.49) v5(27.3,72.62) v5(27.3,58.47) v5(27.3,54.6) v5(27.3,53.47) v5(27.3,49.6) v5(27.3,48.47) v5(27.3,44.6) v5(27.57,40.92) v5(27.57,39.65) v5(27.65,135.25) v5(27.68,118.24) v5(27.74,43.31) v5(27.79,206.86) v5(27.79,205.89) v5(27.79,204.36) v5(27.79,203.39) v5(27.79,201.86) v5(27.79,200.89) v5(27.79,199.36) v5(27.79,198.39) v5(27.79,196.86) v5(27.79,195.89) v5(27.79,194.36) v5(27.79,193.39) v5(27.81,191.84) v5(27.77,190.87) v5(27.79,189.36) v5(27.79,188.39) v5(27.79,173.84) v5(27.79,172.87) v5(27.79,171.34) v5(27.79,170.37) v5(27.79,168.84) v5(27.79,167.87) v5(27.79,166.34) v5(27.79,165.37) v5(27.79,163.84) v5(27.79,162.87) v5(27.79,161.34) v5(27.79,160.37) v5(27.79,158.84) v5(27.79,157.87) v5(27.79,156.34) v5(27.79,155.37) v5(27.79,91.29) v5(27.79,90.32) v5(27.79,88.79) v5(27.79,87.82) v5(27.79,86.29) v5(27.79,85.32) v5(27.79,83.79) v5(27.79,82.82) v5(27.79,81.29) v5(27.79,80.32) v5(27.79,78.79) v5(27.79,77.82) v5(27.79,76.29) v5(27.79,75.32) v5(27.79,73.79) v5(27.79,72.82) v5(27.79,58.27) v5(27.79,57.3) v5(27.79,55.77) v5(27.79,54.8) v5(27.79,53.27) v5(27.79,52.3) v5(27.79,50.77) v5(27.79,49.8) v5(27.79,48.27) v5(27.79,47.3) v5(27.79,45.77) v5(27.79,44.8) v5(27.83,42.35) v5(27.85,135.74) v5(27.85,134.77) v5(27.88,118.72) v5(27.88,117.75) v5(27.94,40.55) v5(27.94,40.02) v5(27.99,206.38) v5(27.99,203.88) v5(27.99,201.38) v5(27.99,198.88) v5(27.99,196.37) v5(27.99,193.88) v5(27.99,191.35) v5(27.99,188.88) v5(27.99,173.35) v5(27.99,170.86) v5(27.99,168.36) v5(27.99,165.86) v5(27.99,163.35) v5(27.99,160.85) v5(27.99,158.36) v5(27.99,155.86) v5(27.99,90.81) v5(27.99,88.31) v5(27.99,85.81) v5(27.99,83.31) v5(27.99,80.8) v5(27.99,78.31) v5(27.99,75.81) v5(27.99,73.31) v5(27.99,57.78) v5(27.99,55.29) v5(27.99,52.79) v5(27.99,50.29) v5(27.99,47.78) v5(27.99,45.28) v5(27.99,42.84) v5(28.33,135.94) v5(28.33,134.57) v5(28.36,118.92) v5(28.36,117.55) v5(28.82,135.74) v5(28.82,134.77) v5(28.84,117.75) v5(29.04,118.24) v5(30.18,118.24) v5(30.35,135.74) v5(30.35,134.77) v5(30.38,117.75) v5(30.83,135.94) v5(30.83,134.57) v5(30.86,118.92) v5(30.86,117.55) v5(31.32,135.74) v5(31.32,134.77) v5(31.34,118.72) v5(31.34,117.75) v5(31.52,135.25) v5(31.54,118.24) v5(33.63,211.2) v5(33.61,208.88) v5(33.63,206.2) v5(33.61,203.88) v5(33.62,201.26) v5(33.61,198.88) v5(33.63,196.2) v5(33.61,193.88) v5(33.64,178.15) v5(33.61,175.86) v5(33.63,173.18) v5(33.61,170.86) v5(33.62,168.21) v5(33.61,165.86) v5(33.62,163.21) v5(33.61,160.86) v5(33.63,94.44) v5(33.61,92.12) v5(33.62,89.47) v5(33.61,87.12) v5(33.62,84.47) v5(33.61,82.11) v5(33.63,79.44) v5(33.61,77.12) v5(33.64,61.31) v5(33.61,59.02) v5(33.64,56.31) v5(33.61,54.02) v5(33.64,51.31) v5(33.61,49.02) v5(33.63,46.34) v5(33.61,44.02) v5(33.7,211.72) v5(33.7,206.72) v5(33.73,201.77) v5(33.7,196.72) v5(33.68,178.67) v5(33.7,173.7) v5(33.71,168.72) v5(33.71,163.72) v5(33.7,94.96) v5(33.71,89.98) v5(33.71,84.98) v5(33.7,79.96) v5(33.68,61.83) v5(33.68,56.83) v5(33.68,51.83) v5(33.7,46.86) v5(33.81,208.39) v5(33.81,203.39) v5(33.81,198.39) v5(33.81,193.39) v5(33.81,175.37) v5(33.81,170.37) v5(33.81,165.37) v5(33.81,160.37) v5(33.81,91.63) v5(33.81,86.63) v5(33.81,81.63) v5(33.81,76.63) v5(33.81,58.53) v5(33.81,53.53) v5(33.81,48.53) v5(33.81,43.53) v5(34.11,212.04) v5(34.11,207.04) v5(34.11,197.04) v5(34.09,179.01) v5(34.11,174.02) v5(34.14,169.02) v5(34.14,164.02) v5(34.11,95.27) v5(34.14,90.28) v5(34.14,85.28) v5(34.11,80.27) v5(34.09,62.17) v5(34.09,57.17) v5(34.09,52.17) v5(34.11,47.18) v5(34.17,202.05) v5(34.29,209.56) v5(34.29,208.19) v5(34.29,204.56) v5(34.29,203.19) v5(34.29,199.56) v5(34.29,198.19) v5(34.29,194.56) v5(34.29,193.19) v5(34.29,176.54) v5(34.29,175.17) v5(34.29,171.54) v5(34.29,170.17) v5(34.29,166.54) v5(34.29,165.17) v5(34.29,161.54) v5(34.29,160.17) v5(34.29,92.8) v5(34.29,91.43) v5(34.29,87.8) v5(34.29,86.43) v5(34.29,82.8) v5(34.29,81.43) v5(34.29,77.8) v5(34.29,76.43) v5(34.29,59.7) v5(34.29,58.33) v5(34.29,54.7) v5(34.29,53.33) v5(34.29,49.7) v5(34.29,48.33) v5(34.29,44.7) v5(34.29,43.33) v5(34.41,200.7) v5(34.44,167.69) v5(34.44,162.69) v5(34.44,88.95) v5(34.44,83.95) v5(34.47,210.72) v5(34.47,205.72) v5(34.47,195.72) v5(34.5,177.7) v5(34.47,172.7) v5(34.47,93.96) v5(34.47,78.96) v5(34.5,60.86) v5(34.5,55.86) v5(34.5,50.86) v5(34.47,45.86) v5(34.63,211.97) v5(34.63,206.97) v5(34.63,196.97) v5(34.61,178.96) v5(34.63,173.95) v5(34.63,95.21) v5(34.63,80.21) v5(34.61,62.12) v5(34.61,57.12) v5(34.61,52.12) v5(34.63,47.11) v5(34.68,201.94) v5(34.66,168.93) v5(34.66,163.93) v5(34.66,90.19) v5(34.66,85.19) v5(34.77,209.36) v5(34.77,208.39) v5(34.77,204.36) v5(34.77,203.39) v5(34.85,200.98) v5(34.77,199.36) v5(34.77,198.39) v5(34.77,194.36) v5(34.77,193.39) v5(34.77,176.34) v5(34.77,175.37) v5(34.77,171.34) v5(34.77,170.37) v5(34.77,166.34) v5(34.77,165.37) v5(34.77,161.34) v5(34.77,160.37) v5(34.77,92.6) v5(34.77,91.63) v5(34.77,87.6) v5(34.77,86.63) v5(34.77,82.6) v5(34.77,81.63) v5(34.77,77.6) v5(34.77,76.63) v5(34.77,59.5) v5(34.77,58.53) v5(34.77,54.5) v5(34.77,53.53) v5(34.77,49.5) v5(34.77,48.53) v5(34.77,44.5) v5(34.77,43.53) v5(34.95,211.55) v5(34.88,211.03) v5(34.95,206.55) v5(34.88,206.03) v5(34.95,196.55) v5(34.88,196.03) v5(34.94,178.56) v5(34.9,178.04) v5(34.88,173.01) v5(34.87,167.99) v5(34.87,162.99) v5(34.95,94.79) v5(34.88,94.27) v5(34.87,89.25) v5(34.87,84.25) v5(34.95,79.79) v5(34.88,79.27) v5(34.94,61.72) v5(34.9,61.2) v5(34.94,56.72) v5(34.9,56.2) v5(34.94,51.72) v5(34.9,51.2) v5(34.88,46.17) v5(34.97,208.88) v5(34.97,203.88) v5(34.96,201.49) v5(34.97,198.88) v5(34.97,193.88) v5(34.97,175.86) v5(34.95,173.53) v5(34.97,170.86) v5(34.96,168.5) v5(34.97,165.86) v5(34.96,163.5) v5(34.97,160.86) v5(34.97,92.12) v5(34.96,89.76) v5(34.97,87.12) v5(34.96,84.76) v5(34.97,82.11) v5(34.97,77.12) v5(34.97,59.02) v5(34.97,54.02) v5(34.97,49.02) v5(34.95,46.69) v5(34.97,44.02) v6(0.89,249.3) v6(0.89,248.79) v6(0.89,248.28) v6(0.89,247.78) v6(0.89,247.27) v6(0.89,246.76) v6(0.89,246.25) v6(0.89,245.75) v6(0.89,245.24) v6(0.89,244.73) v6(0.89,244.22) v6(0.89,243.71) v6(0.89,243.21) v6(0.89,242.7) v6(0.89,242.19) v6(0.89,241.68) v6(0.89,241.17) v6(0.89,240.66) v6(0.89,240.16) v6(0.89,239.65) v6(0.89,239.14) v6(0.89,238.63) v6(0.89,238.12) v6(0.89,237.62) v6(0.89,237.11) v6(0.89,236.6) v6(0.89,236.09) v6(0.89,235.59) v6(0.89,235.08) v6(0.89,234.57) v6(0.89,234.06) v6(0.89,233.55) v6(0.89,233.04) v6(0.89,232.54) v6(0.89,232.03) v6(0.89,231.52) v6(0.89,231.01) v6(0.89,230.5) v6(0.89,230) v6(0.89,229.49) v6(0.89,228.98) v6(0.89,228.47) v6(0.89,227.97) v6(0.89,227.46) v6(0.89,226.95) v6(0.89,226.44) v6(0.89,225.93) v6(0.89,225.43) v6(0.89,224.92) v6(0.89,224.41) v6(0.89,223.9) v6(0.89,223.39) v6(0.89,222.88) v6(0.89,222.38) v6(0.89,221.87) v6(0.89,221.36) v6(0.89,220.85) v6(0.89,220.34) v6(0.89,219.84) v6(0.89,219.33) v6(0.89,218.82) v6(0.89,218.31) v6(0.89,217.81) v6(0.89,217.3) v6(0.89,216.79) v6(0.89,216.28) v6(0.89,215.77) v6(0.89,215.26) v6(0.89,214.76) v6(0.89,214.25) v6(0.89,213.74) v6(0.89,213.23) v6(0.89,212.72) v6(0.89,212.22) v6(0.89,211.71) v6(0.89,211.2) v6(0.89,210.69) v6(0.89,210.19) v6(0.89,209.68) v6(0.89,209.17) v6(0.89,208.66) v6(0.89,208.15) v6(0.89,207.65) v6(0.89,207.14) v6(0.89,206.63) v6(0.89,206.12) v6(0.89,205.61) v6(0.89,205.1) v6(0.89,204.6) v6(0.89,204.09) v6(0.89,203.58) v6(0.89,203.07) v6(0.89,202.56) v6(0.89,202.06) v6(0.89,201.55) v6(0.89,201.04) v6(0.89,200.53) v6(0.89,200.03) v6(0.89,199.52) v6(0.89,199.01) v6(0.89,198.5) v6(0.89,197.99) v6(0.89,197.49) v6(0.89,196.98) v6(0.89,196.47) v6(0.89,195.96) v6(0.89,195.45) v6(0.89,194.94) v6(0.89,194.44) v6(0.89,193.93) v6(0.89,193.42) v6(0.89,192.91) v6(0.89,192.41) v6(0.89,191.9) v6(0.89,191.39) v6(0.89,190.88) v6(0.89,190.37) v6(0.89,189.87) v6(0.89,189.36) v6(0.89,188.85) v6(0.89,188.34) v6(0.89,187.83) v6(0.89,187.32) v6(0.89,186.82) v6(0.89,186.31) v6(0.89,185.8) v6(0.89,185.29) v6(0.89,184.78) v6(0.89,184.28) v6(0.89,183.77) v6(0.89,183.26) v6(0.89,182.75) v6(0.89,182.25) v6(0.89,181.74) v6(0.89,181.23) v6(0.89,180.72) v6(0.89,180.21) v6(0.89,179.71) v6(0.89,179.2) v6(0.89,178.69) v6(0.89,178.18) v6(0.89,177.67) v6(0.89,177.16) v6(0.89,176.66) v6(0.89,176.15) v6(0.89,175.64) v6(0.89,175.13) v6(0.89,174.62) v6(0.89,174.12) v6(0.89,173.61) v6(0.89,173.1) v6(0.89,172.59) v6(0.89,172.09) v6(0.89,171.58) v6(0.89,171.07) v6(0.89,170.56) v6(0.89,170.05) v6(0.89,169.54) v6(0.89,169.04) v6(0.89,168.53) v6(0.89,168.02) v6(0.89,167.51) v6(0.89,167) v6(0.89,166.5) v6(0.89,165.99) v6(0.89,165.48) v6(0.89,164.97) v6(0.89,164.47) v6(0.89,163.96) v6(0.89,163.45) v6(0.89,162.94) v6(0.89,162.43) v6(0.89,161.93) v6(0.89,161.42) v6(0.89,160.91) v6(0.89,160.4) v6(0.89,159.89) v6(0.89,159.38) v6(0.89,158.88) v6(0.89,158.37) v6(0.89,157.86) v6(0.89,157.35) v6(0.89,156.84) v6(0.89,156.34) v6(0.89,155.83) v6(0.89,155.32) v6(0.89,154.81) v6(0.89,154.31) v6(0.89,153.8) v6(0.89,153.29) v6(0.89,152.78) v6(0.89,152.27) v6(0.89,151.76) v6(0.89,151.26) v6(0.89,150.75) v6(0.89,150.24) v6(0.89,149.73) v6(0.89,149.22) v6(0.89,148.72) v6(0.89,148.21) v6(0.89,147.7) v6(0.89,147.19) v6(0.89,146.69) v6(0.89,146.18) v6(0.89,145.67) v6(0.89,145.16) v6(0.89,144.65) v6(0.89,144.15) v6(0.89,143.64) v6(0.89,143.13) v6(0.89,142.62) v6(0.89,142.11) v6(0.89,141.6) v6(0.89,141.1) v6(0.89,140.59) v6(0.89,140.08) v6(0.89,139.57) v6(0.89,139.06) v6(0.89,138.56) v6(0.89,138.05) v6(0.89,137.54) v6(0.89,137.03) v6(0.89,136.53) v6(0.89,136.02) v6(0.89,135.51) v6(0.89,135) v6(0.89,134.49) v6(0.89,133.99) v6(0.89,133.48) v6(0.89,132.97) v6(0.89,132.46) v6(0.89,131.95) v6(0.89,131.44) v6(0.89,130.94) v6(0.89,130.43) v6(0.89,129.92) v6(0.89,129.41) v6(0.89,128.91) v6(0.89,128.4) v6(0.89,127.89) v6(0.89,127.38) v6(0.89,126.87) v6(0.89,126.36) v6(0.89,125.86) v6(0.89,125.35) v6(0.89,124.84) v6(0.89,124.33) v6(0.89,123.83) v6(0.89,123.32) v6(0.89,122.81) v6(0.89,122.3) v6(0.89,121.79) v6(0.89,121.28) v6(0.89,120.78) v6(0.89,120.27) v6(0.89,119.76) v6(0.89,119.25) v6(0.89,118.75) v6(0.89,118.24) v6(0.89,117.73) v6(0.89,117.22) v6(0.89,116.71) v6(0.89,116.2) v6(0.89,115.7) v6(0.89,115.19) v6(0.89,114.68) v6(0.89,114.17) v6(0.89,113.67) v6(0.89,113.16) v6(0.89,112.65) v6(0.89,112.14) v6(0.89,111.63) v6(0.89,111.12) v6(0.89,110.62) v6(0.89,110.11) v6(0.89,109.6) v6(0.89,109.09) v6(0.89,108.58) v6(0.89,108.08) v6(0.89,107.57) v6(0.89,107.06) v6(0.89,106.55) v6(0.89,106.05) v6(0.89,105.54) v6(0.89,105.03) v6(0.89,104.52) v6(0.89,104.01) v6(0.89,103.5) v6(0.89,103) v6(0.89,102.49) v6(0.89,101.98) v6(0.89,101.47) v6(0.89,100.97) v6(0.89,100.46) v6(0.89,99.95) v6(0.89,99.44) v6(0.89,98.93) v6(0.89,98.42) v6(0.89,97.92) v6(0.89,97.41) v6(0.89,96.9) v6(0.89,96.39) v6(0.89,95.89) v6(0.89,95.38) v6(0.89,94.87) v6(0.89,94.36) v6(0.89,93.85) v6(0.89,93.34) v6(0.89,92.84) v6(0.89,92.33) v6(0.89,91.82) v6(0.89,91.31) v6(0.89,90.81) v6(0.89,90.3) v6(0.89,89.79) v6(0.89,89.28) v6(0.89,88.77) v6(0.89,88.27) v6(0.89,87.76) v6(0.89,87.25) v6(0.89,86.74) v6(0.89,86.23) v6(0.89,85.72) v6(0.89,85.22) v6(0.89,84.71) v6(0.89,84.2) v6(0.89,83.69) v6(0.89,83.19) v6(0.89,82.68) v6(0.89,82.17) v6(0.89,81.66) v6(0.89,81.15) v6(0.89,80.64) v6(0.89,80.14) v6(0.89,79.63) v6(0.89,79.12) v6(0.89,78.61) v6(0.89,78.11) v6(0.89,77.6) v6(0.89,77.09) v6(0.89,76.58) v6(0.89,76.07) v6(0.89,75.56) v6(0.89,75.06) v6(0.89,74.55) v6(0.89,74.04) v6(0.89,73.53) v6(0.89,73.03) v6(0.89,72.52) v6(0.89,72.01) v6(0.89,71.5) v6(0.89,70.99) v6(0.89,70.48) v6(0.89,69.98) v6(0.89,69.47) v6(0.89,68.96) v6(0.89,68.45) v6(0.89,67.94) v6(0.89,67.44) v6(0.89,66.93) v6(0.89,66.42) v6(0.89,65.91) v6(0.89,65.41) v6(0.89,64.9) v6(0.89,64.39) v6(0.89,63.88) v6(0.89,63.37) v6(0.89,62.87) v6(0.89,62.36) v6(0.89,61.85) v6(0.89,61.34) v6(0.89,60.83) v6(0.89,60.33) v6(0.89,59.82) v6(0.89,59.31) v6(0.89,58.8) v6(0.89,58.29) v6(0.89,57.78) v6(0.89,57.28) v6(0.89,56.77) v6(0.89,56.26) v6(0.89,55.75) v6(0.89,55.24) v6(0.89,54.74) v6(0.89,54.23) v6(0.89,53.72) v6(0.89,53.21) v6(0.89,52.7) v6(0.89,52.2) v6(0.89,51.69) v6(0.89,51.18) v6(0.89,50.67) v6(0.89,50.16) v6(0.89,49.66) v6(0.89,49.15) v6(0.89,48.64) v6(0.89,48.13) v6(0.89,47.62) v6(0.89,47.12) v6(0.89,46.61) v6(0.89,46.1) v6(0.89,45.59) v6(0.89,45.09) v6(0.89,44.58) v6(0.89,44.07) v6(0.89,43.56) v6(0.89,43.05) v6(0.89,42.55) v6(0.89,42.04) v6(0.89,41.53) v6(0.89,41.02) v6(0.89,40.51) v6(0.89,40.01) v6(0.89,39.5) v6(0.89,38.99) v6(0.89,38.48) v6(0.89,37.97) v6(0.89,37.47) v6(0.89,36.96) v6(0.89,36.45) v6(0.89,35.94) v6(0.89,35.43) v6(0.89,34.92) v6(0.89,34.42) v6(0.89,33.91) v6(0.89,33.4) v6(0.89,32.89) v6(0.89,32.38) v6(0.89,31.88) v6(0.89,31.37) v6(0.89,30.86) v6(0.89,30.35) v6(0.89,29.84) v6(0.89,29.34) v6(0.89,28.83) v6(0.89,28.32) v6(0.89,27.81) v6(0.89,27.3) v6(0.89,26.8) v6(0.89,26.29) v6(0.89,25.78) v6(0.89,25.27) v6(0.89,24.77) v6(0.89,24.26) v6(0.89,23.75) v6(0.89,23.24) v6(0.89,22.73) v6(0.89,22.23) v6(0.89,21.72) v6(0.89,21.21) v6(0.89,20.7) v6(0.89,20.19) v6(0.89,19.68) v6(0.89,19.18) v6(0.89,18.67) v6(0.89,18.16) v6(0.89,17.65) v6(0.89,17.14) v6(0.89,16.64) v6(0.89,16.13) v6(0.89,15.62) v6(0.89,15.11) v6(0.89,14.61) v6(0.89,14.1) v6(0.89,13.59) v6(0.89,13.08) v6(0.89,12.57) v6(0.89,12.06) v6(0.89,11.56) v6(0.89,11.05) v6(0.89,10.54) v6(0.89,10.03) v6(0.89,9.53) v6(0.89,9.02) v6(0.89,8.51) v6(0.89,8) v6(0.89,7.49) v6(0.89,6.99) v6(0.89,6.48) v6(0.89,5.97) v6(0.89,5.46) v6(0.89,4.95) v6(0.89,4.45) v6(0.89,3.94) v6(0.89,3.43) v6(0.89,2.92) v6(0.89,2.41) v6(0.89,1.91) v6(0.89,1.4) v6(0.89,0.89) v6(1.4,249.3) v6(1.4,0.89) v6(1.91,249.3) v6(1.91,0.89) v6(2.41,249.3) v6(2.41,0.89) v6(2.92,249.3) v6(2.92,0.89) v6(3.43,249.3) v6(3.43,0.89) v6(3.94,249.3) v6(3.94,0.89) v6(4.45,249.3) v6(4.45,0.89) v6(4.95,249.3) v6(4.95,0.89) v6(5.46,249.3) v6(5.46,0.89) v6(5.97,249.3) v6(5.97,0.89) v6(6.48,249.3) v6(6.48,0.89) v6(6.99,249.3) v6(6.99,0.89) v6(7.49,249.3) v6(7.49,0.89) v6(8,249.3) v6(8,0.89) v6(8.51,249.3) v6(8.51,0.89) v6(9.02,249.3) v6(9.02,0.89) v6(9.53,249.3) v6(9.53,0.89) v6(10.03,249.3) v6(10.03,0.89) v6(10.54,249.3) v6(10.54,0.89) v6(11.05,249.3) v6(11.05,0.89) v6(11.56,249.3) v6(11.56,0.89) v6(12.06,249.3) v6(12.06,0.89) v6(12.57,249.3) v6(12.57,0.89) v6(13.08,249.3) v6(13.08,0.89) v6(13.59,249.3) v6(13.59,0.89) v6(14.1,249.3) v6(14.1,0.89) v6(14.61,249.3) v6(14.61,0.89) v6(15.11,249.3) v6(15.11,0.89) v6(15.62,249.3) v6(15.62,0.89) v6(16.13,249.3) v6(16.13,0.89) v6(16.64,249.3) v6(16.64,0.89) v6(17.14,249.3) v6(17.14,0.89) v6(17.65,249.3) v6(17.65,0.89) v6(18.16,249.3) v6(18.16,0.89) v6(18.37,221.2) v6(18.67,249.3) v6(18.67,0.89) v6(19.18,249.3) v6(19.18,0.89) v6(19.68,249.3) v6(19.68,0.89) v6(20.19,249.3) v6(20.19,0.89) v6(20.7,249.3) v6(20.7,0.89) v6(21.21,249.3) v6(21.21,0.89) v6(21.72,249.3) v6(21.72,0.89) v6(22.23,249.3) v6(22.23,8.26) v6(22.23,0.89) v6(22.73,249.3) v6(22.73,0.89) v6(23.24,249.3) v6(23.24,0.89) v6(23.75,249.3) v6(23.75,0.89) v6(24.26,249.3) v6(24.26,0.89) v6(24.77,249.3) v6(24.77,0.89) v6(25.27,249.3) v6(25.27,0.89) v6(25.78,249.3) v6(25.78,0.89) v6(26.29,249.3) v6(26.29,0.89) v6(26.8,249.3) v6(26.8,0.89) v6(27.3,249.3) v6(27.3,0.89) v6(27.81,249.3) v6(27.81,0.89) v6(28.32,249.3) v6(28.32,0.89) v6(28.83,249.3) v6(28.83,0.89) v6(29.34,249.3) v6(29.34,0.89) v6(29.84,249.3) v6(29.84,0.89) v6(30.35,249.3) v6(30.35,0.89) v6(30.86,249.3) v6(30.86,0.89) v6(31.37,249.3) v6(31.37,0.89) v6(31.52,229.32) v6(31.88,249.3) v6(31.88,0.89) v6(32.38,249.3) v6(32.38,0.89) v6(32.89,249.3) v6(32.89,0.89) v6(33.03,229.32) v6(33.4,249.3) v6(33.4,0.89) v6(33.91,249.3) v6(33.91,0.89) v6(34.28,229.31) v6(34.42,249.3) v6(34.42,0.89) v6(34.92,249.3) v6(34.92,0.89) v6(35.43,249.3) v6(35.43,0.89) v6(35.94,249.3) v6(35.94,0.89) v6(36.45,249.3) v6(36.45,0.89) v6(36.96,249.3) v6(36.96,0.89) v6(37.47,249.3) v6(37.47,0.89) v6(37.97,249.3) v6(37.97,0.89) v6(38.48,249.3) v6(38.48,0.89) v6(38.99,249.3) v6(38.99,0.89) v6(39.5,249.3) v6(39.5,0.89) v6(40.01,249.3) v6(40.01,0.89) v6(40.51,249.3) v6(40.51,0.89) v6(41.02,249.3) v6(41.02,0.89) v6(41.53,249.3) v6(41.53,0.89) v6(42.04,249.3) v6(42.04,0.89) v6(42.55,249.3) v6(42.55,0.89) v6(43.05,249.3) v6(43.05,0.89) v6(43.56,249.3) v6(43.56,0.89) v6(44.07,249.3) v6(44.07,0.89) v6(44.58,249.3) v6(44.58,0.89) v6(45.09,249.3) v6(45.09,0.89) v6(45.59,249.3) v6(45.59,0.89) v6(46.1,249.3) v6(46.1,0.89) v6(46.61,249.3) v6(46.61,0.89) v6(47.12,249.3) v6(47.12,0.89) v6(47.43,153.69) v6(47.43,133.33) v6(47.62,249.3) v6(47.62,0.89) v6(47.71,154.36) v6(47.71,153.01) v6(47.71,134.01) v6(47.71,132.66) v6(48.13,249.3) v6(48.07,56.07) v6(48.07,37.91) v6(48.13,0.89) v6(48.18,195.58) v6(48.35,56.74) v6(48.35,55.4) v6(48.35,38.58) v6(48.35,37.24) v6(48.4,213.44) v6(48.38,154.64) v6(48.38,152.73) v6(48.38,134.29) v6(48.38,132.38) v6(48.46,196.25) v6(48.46,194.91) v6(48.64,249.3) v6(48.64,0.89) v6(48.68,214.11) v6(48.68,212.76) v6(49.02,57.02) v6(49.02,55.12) v6(49.02,38.86) v6(49.02,36.96) v6(49.15,249.3) v6(49.14,196.53) v6(49.14,194.63) v6(49.05,154.36) v6(49.05,132.66) v6(49.15,0.89) v6(49.33,153.69) v6(49.33,133.33) v6(49.35,214.39) v6(49.35,212.48) v6(49.5,116.79) v6(49.45,99.06) v6(49.66,249.3) v6(49.73,99.73) v6(49.73,98.39) v6(49.69,56.74) v6(49.69,37.24) v6(49.66,0.89) v6(49.81,194.91) v6(49.78,117.46) v6(49.78,116.12) v6(50.03,214.11) v6(49.97,56.07) v6(49.97,37.91) v6(50.09,195.58) v6(50.16,249.3) v6(50.16,0.89) v6(50.3,213.44) v6(50.41,100.01) v6(50.41,98.11) v6(50.46,117.74) v6(50.46,115.84) v6(50.67,249.3) v6(50.67,0.89) v6(51.13,117.46) v6(51.08,98.39) v6(51.18,249.3) v6(51.18,0.89) v6(51.41,116.79) v6(51.36,99.06) v6(51.69,249.3) v6(51.69,0.89) v6(52.2,249.3) v6(52.2,0.89) v6(52.7,249.3) v6(52.7,0.89) v6(53.21,249.3) v6(53.21,0.89) v6(53.72,249.3) v6(53.72,0.89) v6(54.23,249.3) v6(54.23,0.89) v6(54.74,249.3) v6(54.74,0.89) v6(55.24,249.3) v6(55.24,0.89) v6(55.75,249.3) v6(55.75,0.89) v6(56.26,249.3) v6(56.26,0.89) v6(56.77,249.3) v6(56.77,0.89) v6(57.28,249.3) v6(57.28,0.89) v6(57.78,249.3) v6(57.78,0.89) v6(58.29,249.3) v6(58.29,0.89) v6(58.8,249.3) v6(58.8,0.89) v6(59.31,249.3) v6(59.31,0.89) v6(59.82,249.3) v6(59.82,0.89) v6(60.33,249.3) v6(60.33,0.89) v6(60.83,249.3) v6(60.83,0.89) v6(61.34,249.3) v6(61.34,0.89) v6(61.85,249.3) v6(61.85,0.89) v6(62.36,249.3) v6(62.36,0.89) v6(62.67,26.69) v6(62.67,6.33) v6(62.79,69.22) v6(62.87,249.3) v6(62.93,87.05) v6(62.95,27.36) v6(62.95,26.01) v6(62.95,7.01) v6(62.95,5.66) v6(62.87,0.89) v6(63.07,69.89) v6(63.07,68.54) v6(63.21,87.72) v6(63.21,86.37) v6(63.31,183.71) v6(63.31,165.54) v6(63.37,249.3) v6(63.37,0.89) v6(63.59,184.38) v6(63.59,183.03) v6(63.59,166.22) v6(63.59,164.87) v6(63.62,27.64) v6(63.62,25.73) v6(63.62,7.29) v6(63.62,5.38) v6(63.74,70.17) v6(63.74,68.26) v6(63.88,249.3) v6(63.88,88) v6(63.88,86.09) v6(63.88,0.89) v6(64.26,184.66) v6(64.26,182.75) v6(64.26,166.5) v6(64.26,164.59) v6(64.29,27.36) v6(64.29,5.66) v6(64.39,249.3) v6(64.41,68.54) v6(64.39,0.89) v6(64.55,87.72) v6(64.57,26.69) v6(64.57,6.33) v6(64.74,243.79) v6(64.69,226.06) v6(64.69,69.22) v6(64.83,87.05) v6(64.9,249.3) v6(64.93,184.38) v6(64.93,164.87) v6(64.9,0.89) v6(65.02,244.46) v6(65.02,243.12) v6(64.97,226.73) v6(64.97,225.39) v6(65.21,183.71) v6(65.21,165.54) v6(65.41,249.3) v6(65.41,0.89) v6(65.65,227.01) v6(65.65,225.11) v6(65.7,244.74) v6(65.7,242.84) v6(65.91,249.3) v6(65.91,0.89) v6(66.32,225.39) v6(66.42,249.3) v6(66.37,244.46) v6(66.42,0.89) v6(66.65,243.79) v6(66.6,226.06) v6(66.93,249.3) v6(66.93,0.89) v6(67.44,249.3) v6(67.44,0.89) v6(67.94,249.3) v6(67.91,205.45) v6(67.91,204.1) v6(67.94,0.89) v6(68.02,48.16) v6(68.02,46.81) v6(68.45,249.3) v6(68.45,0.89) v6(68.58,205.73) v6(68.58,203.82) v6(68.62,145.77) v6(68.62,144.43) v6(68.7,48.44) v6(68.7,46.53) v6(68.96,249.3) v6(68.96,0.89) v6(69.18,108.93) v6(69.18,107.58) v6(69.25,205.45) v6(69.25,204.1) v6(69.3,146.05) v6(69.3,144.15) v6(69.37,48.16) v6(69.37,46.81) v6(69.47,249.3) v6(69.53,204.77) v6(69.47,0.89) v6(69.65,47.48) v6(69.85,109.21) v6(69.85,107.3) v6(69.98,249.3) v6(69.97,145.77) v6(69.97,144.43) v6(69.98,0.89) v6(70.25,145.1) v6(70.48,249.3) v6(70.52,108.93) v6(70.52,107.58) v6(70.48,0.89) v6(70.8,108.25) v6(70.99,249.3) v6(70.99,0.89) v6(71.5,249.3) v6(71.5,0.89) v6(72.01,249.3) v6(72.01,0.89) v6(72.52,249.3) v6(72.52,0.89) v6(73.03,249.3) v6(73.03,0.89) v6(73.53,249.3) v6(73.53,0.89) v6(74.04,249.3) v6(74.04,0.89) v6(74.55,249.3) v6(74.55,0.89) v6(75.06,249.3) v6(75.06,0.89) v6(75.56,249.3) v6(75.56,0.89) v6(76.07,249.3) v6(76.07,0.89) v6(76.58,249.3) v6(76.58,0.89) v6(77.09,249.3) v6(77.09,0.89) v6(77.6,249.3) v6(77.6,0.89) v6(78.11,249.3) v6(78.11,0.89) v6(78.61,249.3) v6(78.61,0.89) v6(79.12,249.3) v6(79.12,0.89) v6(79.63,249.3) v6(79.63,0.89) v6(80.14,249.3) v6(80.14,0.89) v6(80.64,249.3) v6(80.64,0.89) v6(81.15,249.3) v6(81.15,0.89) v6(81.66,249.3) v6(81.72,153.69) v6(81.72,133.33) v6(81.66,0.89) v6(82,154.36) v6(82,153.01) v6(82,134.01) v6(82,132.66) v6(82.17,249.3) v6(82.17,0.89) v6(82.36,56.07) v6(82.36,37.91) v6(82.47,195.58) v6(82.52,116.79) v6(82.47,99.06) v6(82.51,79.08) v6(82.51,77.74) v6(82.64,56.74) v6(82.64,55.4) v6(82.64,38.58) v6(82.64,37.24) v6(82.68,249.3) v6(82.69,213.44) v6(82.67,154.64) v6(82.67,152.73) v6(82.67,134.29) v6(82.67,132.38) v6(82.68,0.89) v6(82.75,196.25) v6(82.75,194.91) v6(82.8,117.46) v6(82.8,116.12) v6(82.75,99.73) v6(82.75,98.39) v6(82.97,214.11) v6(82.97,212.76) v6(83.19,249.3) v6(83.19,79.36) v6(83.19,77.46) v6(83.19,0.89) v6(83.26,175.79) v6(83.26,174.45) v6(83.34,154.36) v6(83.34,132.66) v6(83.31,57.02) v6(83.31,55.12) v6(83.31,38.86) v6(83.31,36.96) v6(83.43,196.53) v6(83.43,194.63) v6(83.43,100.01) v6(83.43,98.11) v6(83.48,117.74) v6(83.48,115.84) v6(83.64,214.39) v6(83.64,212.48) v6(83.62,153.69) v6(83.62,133.33) v6(83.69,249.3) v6(83.69,0.89) v6(83.94,176.07) v6(83.94,174.17) v6(83.86,79.08) v6(83.86,77.74) v6(83.86,18.77) v6(83.86,17.43) v6(83.98,56.74) v6(83.98,37.24) v6(84.1,194.91) v6(84.1,98.39) v6(84.14,78.41) v6(84.2,249.3) v6(84.15,117.46) v6(84.2,0.89) v6(84.32,214.11) v6(84.26,56.07) v6(84.26,37.91) v6(84.42,235.93) v6(84.42,234.58) v6(84.38,195.58) v6(84.43,116.79) v6(84.38,99.06) v6(84.54,19.05) v6(84.54,17.15) v6(84.59,213.44) v6(84.61,175.79) v6(84.61,174.45) v6(84.71,249.3) v6(84.71,0.89) v6(84.89,175.12) v6(85.09,236.21) v6(85.09,234.3) v6(85.22,249.3) v6(85.21,18.77) v6(85.21,17.43) v6(85.22,0.89) v6(85.49,18.1) v6(85.72,249.3) v6(85.72,0.89) v6(85.76,235.93) v6(85.76,234.58) v6(86.04,235.25) v6(86.23,249.3) v6(86.23,0.89) v6(86.74,249.3) v6(86.74,0.89) v6(87.25,249.3) v6(87.25,0.89) v6(87.76,249.3) v6(87.76,0.89) v6(88.27,249.3) v6(88.27,0.89) v6(88.77,249.3) v6(88.77,0.89) v6(89.28,249.3) v6(89.28,0.89) v6(89.79,249.3) v6(89.79,0.89) v6(90.3,249.3) v6(90.3,0.89) v6(90.81,249.3) v6(90.81,0.89) v6(91.31,249.3) v6(91.31,0.89) v6(91.82,249.3) v6(91.82,0.89) v6(92.33,249.3) v6(92.33,0.89) v6(92.84,249.3) v6(92.84,0.89) v6(93.34,249.3) v6(93.34,0.89) v6(93.85,249.3) v6(93.85,0.89) v6(94.36,249.3) v6(94.36,0.89) v6(94.87,249.3) v6(94.87,0.89) v6(95.38,249.3) v6(95.38,0.89) v6(95.89,249.3) v6(95.89,0.89) v6(96.39,249.3) v6(96.39,0.89) v6(96.9,249.3) v6(96.9,0.89) v6(96.96,26.69) v6(96.96,6.33) v6(97.24,27.36) v6(97.24,26.01) v6(97.24,7.01) v6(97.24,5.66) v6(97.41,249.3) v6(97.41,0.89) v6(97.6,183.71) v6(97.6,165.54) v6(97.71,226.06) v6(97.71,68.58) v6(97.76,243.79) v6(97.92,249.3) v6(97.88,184.38) v6(97.88,183.03) v6(97.88,166.22) v6(97.88,164.87) v6(97.9,86.44) v6(97.91,27.64) v6(97.91,25.73) v6(97.91,7.29) v6(97.91,5.38) v6(97.92,0.89) v6(98.04,244.46) v6(98.04,243.12) v6(97.99,226.73) v6(97.99,225.39) v6(97.99,69.25) v6(97.99,67.91) v6(98.18,87.11) v6(98.18,85.76) v6(98.42,249.3) v6(98.42,0.89) v6(98.55,184.66) v6(98.55,182.75) v6(98.55,166.5) v6(98.55,164.59) v6(98.58,27.36) v6(98.58,5.66) v6(98.72,244.74) v6(98.72,242.84) v6(98.67,227.01) v6(98.67,225.11) v6(98.67,69.53) v6(98.67,67.63) v6(98.93,249.3) v6(98.86,87.39) v6(98.86,85.48) v6(98.86,26.69) v6(98.86,6.33) v6(98.93,0.89) v6(99.22,184.38) v6(99.22,164.87) v6(99.34,225.39) v6(99.34,67.91) v6(99.44,249.3) v6(99.39,244.46) v6(99.44,0.89) v6(99.5,183.71) v6(99.5,165.54) v6(99.53,87.11) v6(99.62,226.06) v6(99.62,68.58) v6(99.67,243.79) v6(99.81,86.44) v6(99.95,249.3) v6(99.95,0.89) v6(100.46,249.3) v6(100.46,0.89) v6(100.97,249.3) v6(100.97,0.89) v6(101.47,249.3) v6(101.47,0.89) v6(101.98,249.3) v6(101.98,0.89) v6(102.2,205.45) v6(102.2,204.1) v6(102.2,108.93) v6(102.2,107.58) v6(102.31,48.16) v6(102.31,46.81) v6(102.49,249.3) v6(102.49,0.89) v6(102.87,205.73) v6(102.87,203.82) v6(102.91,145.77) v6(102.91,144.43) v6(102.87,109.21) v6(102.87,107.3) v6(103,249.3) v6(102.99,48.44) v6(102.99,46.53) v6(103,0.89) v6(103.5,249.3) v6(103.54,205.45) v6(103.54,204.1) v6(103.54,108.93) v6(103.54,107.58) v6(103.5,0.89) v6(103.59,146.05) v6(103.59,144.15) v6(103.66,48.16) v6(103.66,46.81) v6(103.82,204.77) v6(103.82,108.25) v6(103.94,47.48) v6(104.01,249.3) v6(104.01,0.89) v6(104.26,145.77) v6(104.26,144.43) v6(104.52,249.3) v6(104.54,145.1) v6(104.52,0.89) v6(105.03,249.3) v6(105.03,0.89) v6(105.54,249.3) v6(105.54,0.89) v6(106.05,249.3) v6(106.05,0.89) v6(106.55,249.3) v6(106.55,0.89) v6(107.06,249.3) v6(107.06,0.89) v6(107.57,249.3) v6(107.57,0.89) v6(108.08,249.3) v6(108.08,0.89) v6(108.58,249.3) v6(108.58,0.89) v6(109.09,249.3) v6(109.09,0.89) v6(109.6,249.3) v6(109.6,0.89) v6(110.11,249.3) v6(110.11,0.89) v6(110.62,249.3) v6(110.62,0.89) v6(111.12,249.3) v6(111.12,0.89) v6(111.63,249.3) v6(111.63,0.89) v6(112.14,249.3) v6(112.14,0.89) v6(112.65,249.3) v6(112.65,0.89) v6(113.16,249.3) v6(113.16,0.89) v6(113.67,249.3) v6(113.67,0.89) v6(114.17,249.3) v6(114.17,0.89) v6(114.68,249.3) v6(114.68,0.89) v6(115.19,249.3) v6(115.19,0.89) v6(115.7,249.3) v6(115.7,0.89) v6(116.2,249.3) v6(116.2,0.89) v6(116.71,249.3) v6(116.71,0.89) v6(117.22,249.3) v6(117.22,0.89) v6(117.44,235.93) v6(117.44,234.58) v6(117.44,78.45) v6(117.44,77.1) v6(117.55,175.79) v6(117.55,174.45) v6(117.73,249.3) v6(117.73,0.89) v6(118.11,236.21) v6(118.11,234.3) v6(118.11,78.73) v6(118.11,76.82) v6(118.24,249.3) v6(118.23,176.07) v6(118.23,174.17) v6(118.15,18.77) v6(118.15,17.43) v6(118.24,0.89) v6(118.75,249.3) v6(118.75,0.89) v6(118.78,235.93) v6(118.78,234.58) v6(118.78,78.45) v6(118.78,77.1) v6(118.83,19.05) v6(118.83,17.15) v6(118.9,175.79) v6(118.9,174.45) v6(119.06,235.25) v6(119.06,77.77) v6(119.18,175.12) v6(119.25,249.3) v6(119.25,0.89) v6(119.5,18.77) v6(119.5,17.43) v6(119.76,249.3) v6(119.78,18.1) v6(119.76,0.89) v6(120.27,249.3) v6(120.27,0.89) v6(120.78,249.3) v6(120.78,0.89) v6(121.28,249.3) v6(121.28,0.89) v6(121.79,249.3) v6(121.79,0.89) v6(122.3,249.3) v6(122.3,0.89) v6(122.81,249.3) v6(122.81,0.89) v6(123.32,249.3) v6(123.32,248.79) v6(123.32,248.28) v6(123.32,247.78) v6(123.32,247.27) v6(123.32,246.76) v6(123.32,246.25) v6(123.32,245.75) v6(123.32,245.24) v6(123.32,244.73) v6(123.32,244.22) v6(123.32,243.71) v6(123.32,243.21) v6(123.32,242.7) v6(123.32,242.19) v6(123.32,241.68) v6(123.32,241.17) v6(123.32,240.66) v6(123.32,240.16) v6(123.32,239.65) v6(123.32,239.14) v6(123.32,238.63) v6(123.32,238.12) v6(123.32,237.62) v6(123.32,237.11) v6(123.32,236.6) v6(123.32,236.09) v6(123.32,235.59) v6(123.32,235.08) v6(123.32,234.57) v6(123.32,234.06) v6(123.32,233.55) v6(123.32,233.04) v6(123.32,232.54) v6(123.32,232.03) v6(123.32,231.52) v6(123.32,231.01) v6(123.32,230.5) v6(123.32,230) v6(123.32,229.49) v6(123.32,228.98) v6(123.32,228.47) v6(123.32,227.97) v6(123.32,227.46) v6(123.32,226.95) v6(123.32,226.44) v6(123.32,225.93) v6(123.32,225.43) v6(123.32,224.92) v6(123.32,224.41) v6(123.32,223.9) v6(123.32,223.39) v6(123.32,222.88) v6(123.32,222.38) v6(123.32,221.87) v6(123.32,221.36) v6(123.32,220.85) v6(123.32,220.34) v6(123.32,219.84) v6(123.32,219.33) v6(123.32,218.82) v6(123.32,218.31) v6(123.32,217.81) v6(123.32,217.3) v6(123.32,216.79) v6(123.32,216.28) v6(123.32,215.77) v6(123.32,215.26) v6(123.32,214.76) v6(123.32,214.25) v6(123.32,213.74) v6(123.32,213.23) v6(123.32,212.72) v6(123.32,212.22) v6(123.32,211.71) v6(123.32,211.2) v6(123.32,210.69) v6(123.32,210.19) v6(123.32,209.68) v6(123.32,209.17) v6(123.32,208.66) v6(123.32,208.15) v6(123.32,207.65) v6(123.32,207.14) v6(123.32,206.63) v6(123.32,206.12) v6(123.32,205.61) v6(123.32,205.1) v6(123.32,204.6) v6(123.32,204.09) v6(123.32,203.58) v6(123.32,203.07) v6(123.32,202.56) v6(123.32,202.06) v6(123.32,201.55) v6(123.32,201.04) v6(123.32,200.53) v6(123.32,200.03) v6(123.32,199.52) v6(123.32,199.01) v6(123.32,198.5) v6(123.32,197.99) v6(123.32,197.49) v6(123.32,196.98) v6(123.32,196.47) v6(123.32,195.96) v6(123.32,195.45) v6(123.32,194.94) v6(123.32,194.44) v6(123.32,193.93) v6(123.32,193.42) v6(123.32,192.91) v6(123.32,192.41) v6(123.32,191.9) v6(123.32,191.39) v6(123.32,190.88) v6(123.32,190.37) v6(123.32,189.87) v6(123.32,189.36) v6(123.32,188.85) v6(123.32,188.34) v6(123.32,187.83) v6(123.32,187.32) v6(123.32,186.82) v6(123.32,186.31) v6(123.32,185.8) v6(123.32,185.29) v6(123.32,184.78) v6(123.32,184.28) v6(123.32,183.77) v6(123.32,183.26) v6(123.32,182.75) v6(123.32,182.25) v6(123.32,181.74) v6(123.32,181.23) v6(123.32,180.72) v6(123.32,180.21) v6(123.32,179.71) v6(123.32,179.2) v6(123.32,178.69) v6(123.32,178.18) v6(123.32,177.67) v6(123.32,177.16) v6(123.32,176.66) v6(123.32,176.15) v6(123.32,175.64) v6(123.32,175.13) v6(123.32,174.62) v6(123.32,174.12) v6(123.32,173.61) v6(123.32,173.1) v6(123.32,172.59) v6(123.32,172.09) v6(123.32,171.58) v6(123.32,171.07) v6(123.32,170.56) v6(123.32,170.05) v6(123.32,169.54) v6(123.32,169.04) v6(123.32,168.53) v6(123.32,168.02) v6(123.32,167.51) v6(123.32,167) v6(123.32,166.5) v6(123.32,165.99) v6(123.32,165.48) v6(123.32,164.97) v6(123.32,164.47) v6(123.32,163.96) v6(123.32,163.45) v6(123.32,162.94) v6(123.32,162.43) v6(123.32,161.93) v6(123.32,161.42) v6(123.32,160.91) v6(123.32,160.4) v6(123.32,159.89) v6(123.32,159.38) v6(123.32,158.88) v6(123.32,158.37) v6(123.32,157.86) v6(123.32,157.35) v6(123.32,156.84) v6(123.32,156.34) v6(123.32,155.83) v6(123.32,155.32) v6(123.32,154.81) v6(123.32,154.31) v6(123.32,153.8) v6(123.32,153.29) v6(123.32,152.78) v6(123.32,152.27) v6(123.32,151.76) v6(123.32,151.26) v6(123.32,150.75) v6(123.32,150.24) v6(123.32,149.73) v6(123.32,149.22) v6(123.32,148.72) v6(123.32,148.21) v6(123.32,147.7) v6(123.32,147.19) v6(123.32,146.69) v6(123.32,146.18) v6(123.32,145.67) v6(123.32,145.16) v6(123.32,144.65) v6(123.32,144.15) v6(123.32,143.64) v6(123.32,143.13) v6(123.32,142.62) v6(123.32,142.11) v6(123.32,141.6) v6(123.32,141.1) v6(123.32,140.59) v6(123.32,140.08) v6(123.32,139.57) v6(123.32,139.06) v6(123.32,138.56) v6(123.32,138.05) v6(123.32,137.54) v6(123.32,137.03) v6(123.32,136.53) v6(123.32,136.02) v6(123.32,135.51) v6(123.32,135) v6(123.32,134.49) v6(123.32,133.99) v6(123.32,133.48) v6(123.32,132.97) v6(123.32,132.46) v6(123.32,131.95) v6(123.32,131.44) v6(123.32,130.94) v6(123.32,130.43) v6(123.32,129.92) v6(123.32,129.41) v6(123.32,128.91) v6(123.32,128.4) v6(123.32,127.89) v6(123.32,127.38) v6(123.32,126.87) v6(123.32,126.36) v6(123.32,125.86) v6(123.32,125.35) v6(123.32,124.84) v6(123.32,124.33) v6(123.32,123.83) v6(123.32,123.32) v6(123.32,122.81) v6(123.32,122.3) v6(123.32,121.79) v6(123.32,121.28) v6(123.32,120.78) v6(123.32,120.27) v6(123.32,119.76) v6(123.32,119.25) v6(123.32,118.75) v6(123.32,118.24) v6(123.32,117.73) v6(123.32,117.22) v6(123.32,116.71) v6(123.32,116.2) v6(123.32,115.7) v6(123.32,115.19) v6(123.32,114.68) v6(123.32,114.17) v6(123.32,113.67) v6(123.32,113.16) v6(123.32,112.65) v6(123.32,112.14) v6(123.32,111.63) v6(123.32,111.12) v6(123.32,110.62) v6(123.32,110.11) v6(123.32,109.6) v6(123.32,109.09) v6(123.32,108.58) v6(123.32,108.08) v6(123.32,107.57) v6(123.32,107.06) v6(123.32,106.55) v6(123.32,106.05) v6(123.32,105.54) v6(123.32,105.03) v6(123.32,104.52) v6(123.32,104.01) v6(123.32,103.5) v6(123.32,103) v6(123.32,102.49) v6(123.32,101.98) v6(123.32,101.47) v6(123.32,100.97) v6(123.32,100.46) v6(123.32,99.95) v6(123.32,99.44) v6(123.32,98.93) v6(123.32,98.42) v6(123.32,97.92) v6(123.32,97.41) v6(123.32,96.9) v6(123.32,96.39) v6(123.32,95.89) v6(123.32,95.38) v6(123.32,94.87) v6(123.32,94.36) v6(123.32,93.85) v6(123.32,93.34) v6(123.32,92.84) v6(123.32,92.33) v6(123.32,91.82) v6(123.32,91.31) v6(123.32,90.81) v6(123.32,90.3) v6(123.32,89.79) v6(123.32,89.28) v6(123.32,88.77) v6(123.32,88.27) v6(123.32,87.76) v6(123.32,87.25) v6(123.32,86.74) v6(123.32,86.23) v6(123.32,85.72) v6(123.32,85.22) v6(123.32,84.71) v6(123.32,84.2) v6(123.32,83.69) v6(123.32,83.19) v6(123.32,82.68) v6(123.32,82.17) v6(123.32,81.66) v6(123.32,81.15) v6(123.32,80.64) v6(123.32,80.14) v6(123.32,79.63) v6(123.32,79.12) v6(123.32,78.61) v6(123.32,78.11) v6(123.32,77.6) v6(123.32,77.09) v6(123.32,76.58) v6(123.32,76.07) v6(123.32,75.56) v6(123.32,75.06) v6(123.32,74.55) v6(123.32,74.04) v6(123.32,73.53) v6(123.32,73.03) v6(123.32,72.52) v6(123.32,72.01) v6(123.32,71.5) v6(123.32,70.99) v6(123.32,70.48) v6(123.32,69.98) v6(123.32,69.47) v6(123.32,68.96) v6(123.32,68.45) v6(123.32,67.94) v6(123.32,67.44) v6(123.32,66.93) v6(123.32,66.42) v6(123.32,65.91) v6(123.32,65.41) v6(123.32,64.9) v6(123.32,64.39) v6(123.32,63.88) v6(123.32,63.37) v6(123.32,62.87) v6(123.32,62.36) v6(123.32,61.85) v6(123.32,61.34) v6(123.32,60.83) v6(123.32,60.33) v6(123.32,59.82) v6(123.32,59.31) v6(123.32,58.8) v6(123.32,58.29) v6(123.32,57.78) v6(123.32,57.28) v6(123.32,56.77) v6(123.32,56.26) v6(123.32,55.75) v6(123.32,55.24) v6(123.32,54.74) v6(123.32,54.23) v6(123.32,53.72) v6(123.32,53.21) v6(123.32,52.7) v6(123.32,52.2) v6(123.32,51.69) v6(123.32,51.18) v6(123.32,50.67) v6(123.32,50.16) v6(123.32,49.66) v6(123.32,49.15) v6(123.32,48.64) v6(123.32,48.13) v6(123.32,47.62) v6(123.32,47.12) v6(123.32,46.61) v6(123.32,46.1) v6(123.32,45.59) v6(123.32,45.09) v6(123.32,44.58) v6(123.32,44.07) v6(123.32,43.56) v6(123.32,43.05) v6(123.32,42.55) v6(123.32,42.04) v6(123.32,41.53) v6(123.32,41.02) v6(123.32,40.51) v6(123.32,40.01) v6(123.32,39.5) v6(123.32,38.99) v6(123.32,38.48) v6(123.32,37.97) v6(123.32,37.47) v6(123.32,36.96) v6(123.32,36.45) v6(123.32,35.94) v6(123.32,35.43) v6(123.32,34.92) v6(123.32,34.42) v6(123.32,33.91) v6(123.32,33.4) v6(123.32,32.89) v6(123.32,32.38) v6(123.32,31.88) v6(123.32,31.37) v6(123.32,30.86) v6(123.32,30.35) v6(123.32,29.84) v6(123.32,29.34) v6(123.32,28.83) v6(123.32,28.32) v6(123.32,27.81) v6(123.32,27.3) v6(123.32,26.8) v6(123.32,26.29) v6(123.32,25.78) v6(123.32,25.27) v6(123.32,24.77) v6(123.32,24.26) v6(123.32,23.75) v6(123.32,23.24) v6(123.32,22.73) v6(123.32,22.23) v6(123.32,21.72) v6(123.32,21.21) v6(123.32,20.7) v6(123.32,20.19) v6(123.32,19.68) v6(123.32,19.18) v6(123.32,18.67) v6(123.32,18.16) v6(123.32,17.65) v6(123.32,17.14) v6(123.32,16.64) v6(123.32,16.13) v6(123.32,15.62) v6(123.32,15.11) v6(123.32,14.61) v6(123.32,14.1) v6(123.32,13.59) v6(123.32,13.08) v6(123.32,12.57) v6(123.32,12.06) v6(123.32,11.56) v6(123.32,11.05) v6(123.32,10.54) v6(123.32,10.03) v6(123.32,9.53) v6(123.32,9.02) v6(123.32,8.51) v6(123.32,8) v6(123.32,7.49) v6(123.32,6.99) v6(123.32,6.48) v6(123.32,5.97) v6(123.32,5.46) v6(123.32,4.95) v6(123.32,4.45) v6(123.32,3.94) v6(123.32,3.43) v6(123.32,2.92) v6(123.32,2.41) v6(123.32,1.91) v6(123.32,1.4) v6(123.32,0.89) v7(57.18,52.5) v7(57.18,41.95) v7(57.78,209.55) v7(57.78,199.39) v7(57.78,148.59) v7(57.78,138.43) v7(59.05,113.03) v7(59.05,102.87) v7(72.39,179.71) v7(72.39,169.54) v7(72.39,83.19) v7(72.39,73.03) v7(73.03,21.59) v7(73.03,11.43) v7(74.3,240.03) v7(74.3,229.87) v7(91.44,52.07) v7(91.44,41.91) v7(92.08,209.55) v7(92.08,199.39) v7(92.08,148.59) v7(92.08,138.43) v7(92.08,113.03) v7(92.08,102.87) v7(106.68,179.71) v7(106.68,169.54) v7(107.31,240.03) v7(107.31,229.87) v7(107.31,82.55) v7(107.31,72.39) v7(107.31,21.59) v7(107.31,11.43) v8(24.67,50.36)
